# Altium PCB PC110-itx.PcbDoc (part 1 of 16)
Units mm, origin at the board's own origin, x right, y up, seen from the top; angles counter-clockwise.
Board outline 170 x 170 mm, 16 copper layers (FC1, FC2, FC3, FC4, IP1, IC1, IC2, IP2, IP3, IC3, IC4, IP4, BC4, BC3, BC2, BC1), stack 3.903 mm thick; 935 components, 1357 nets, 4698 pads, 3240 vias.
Unrouted connection lines stored in the file: 552.
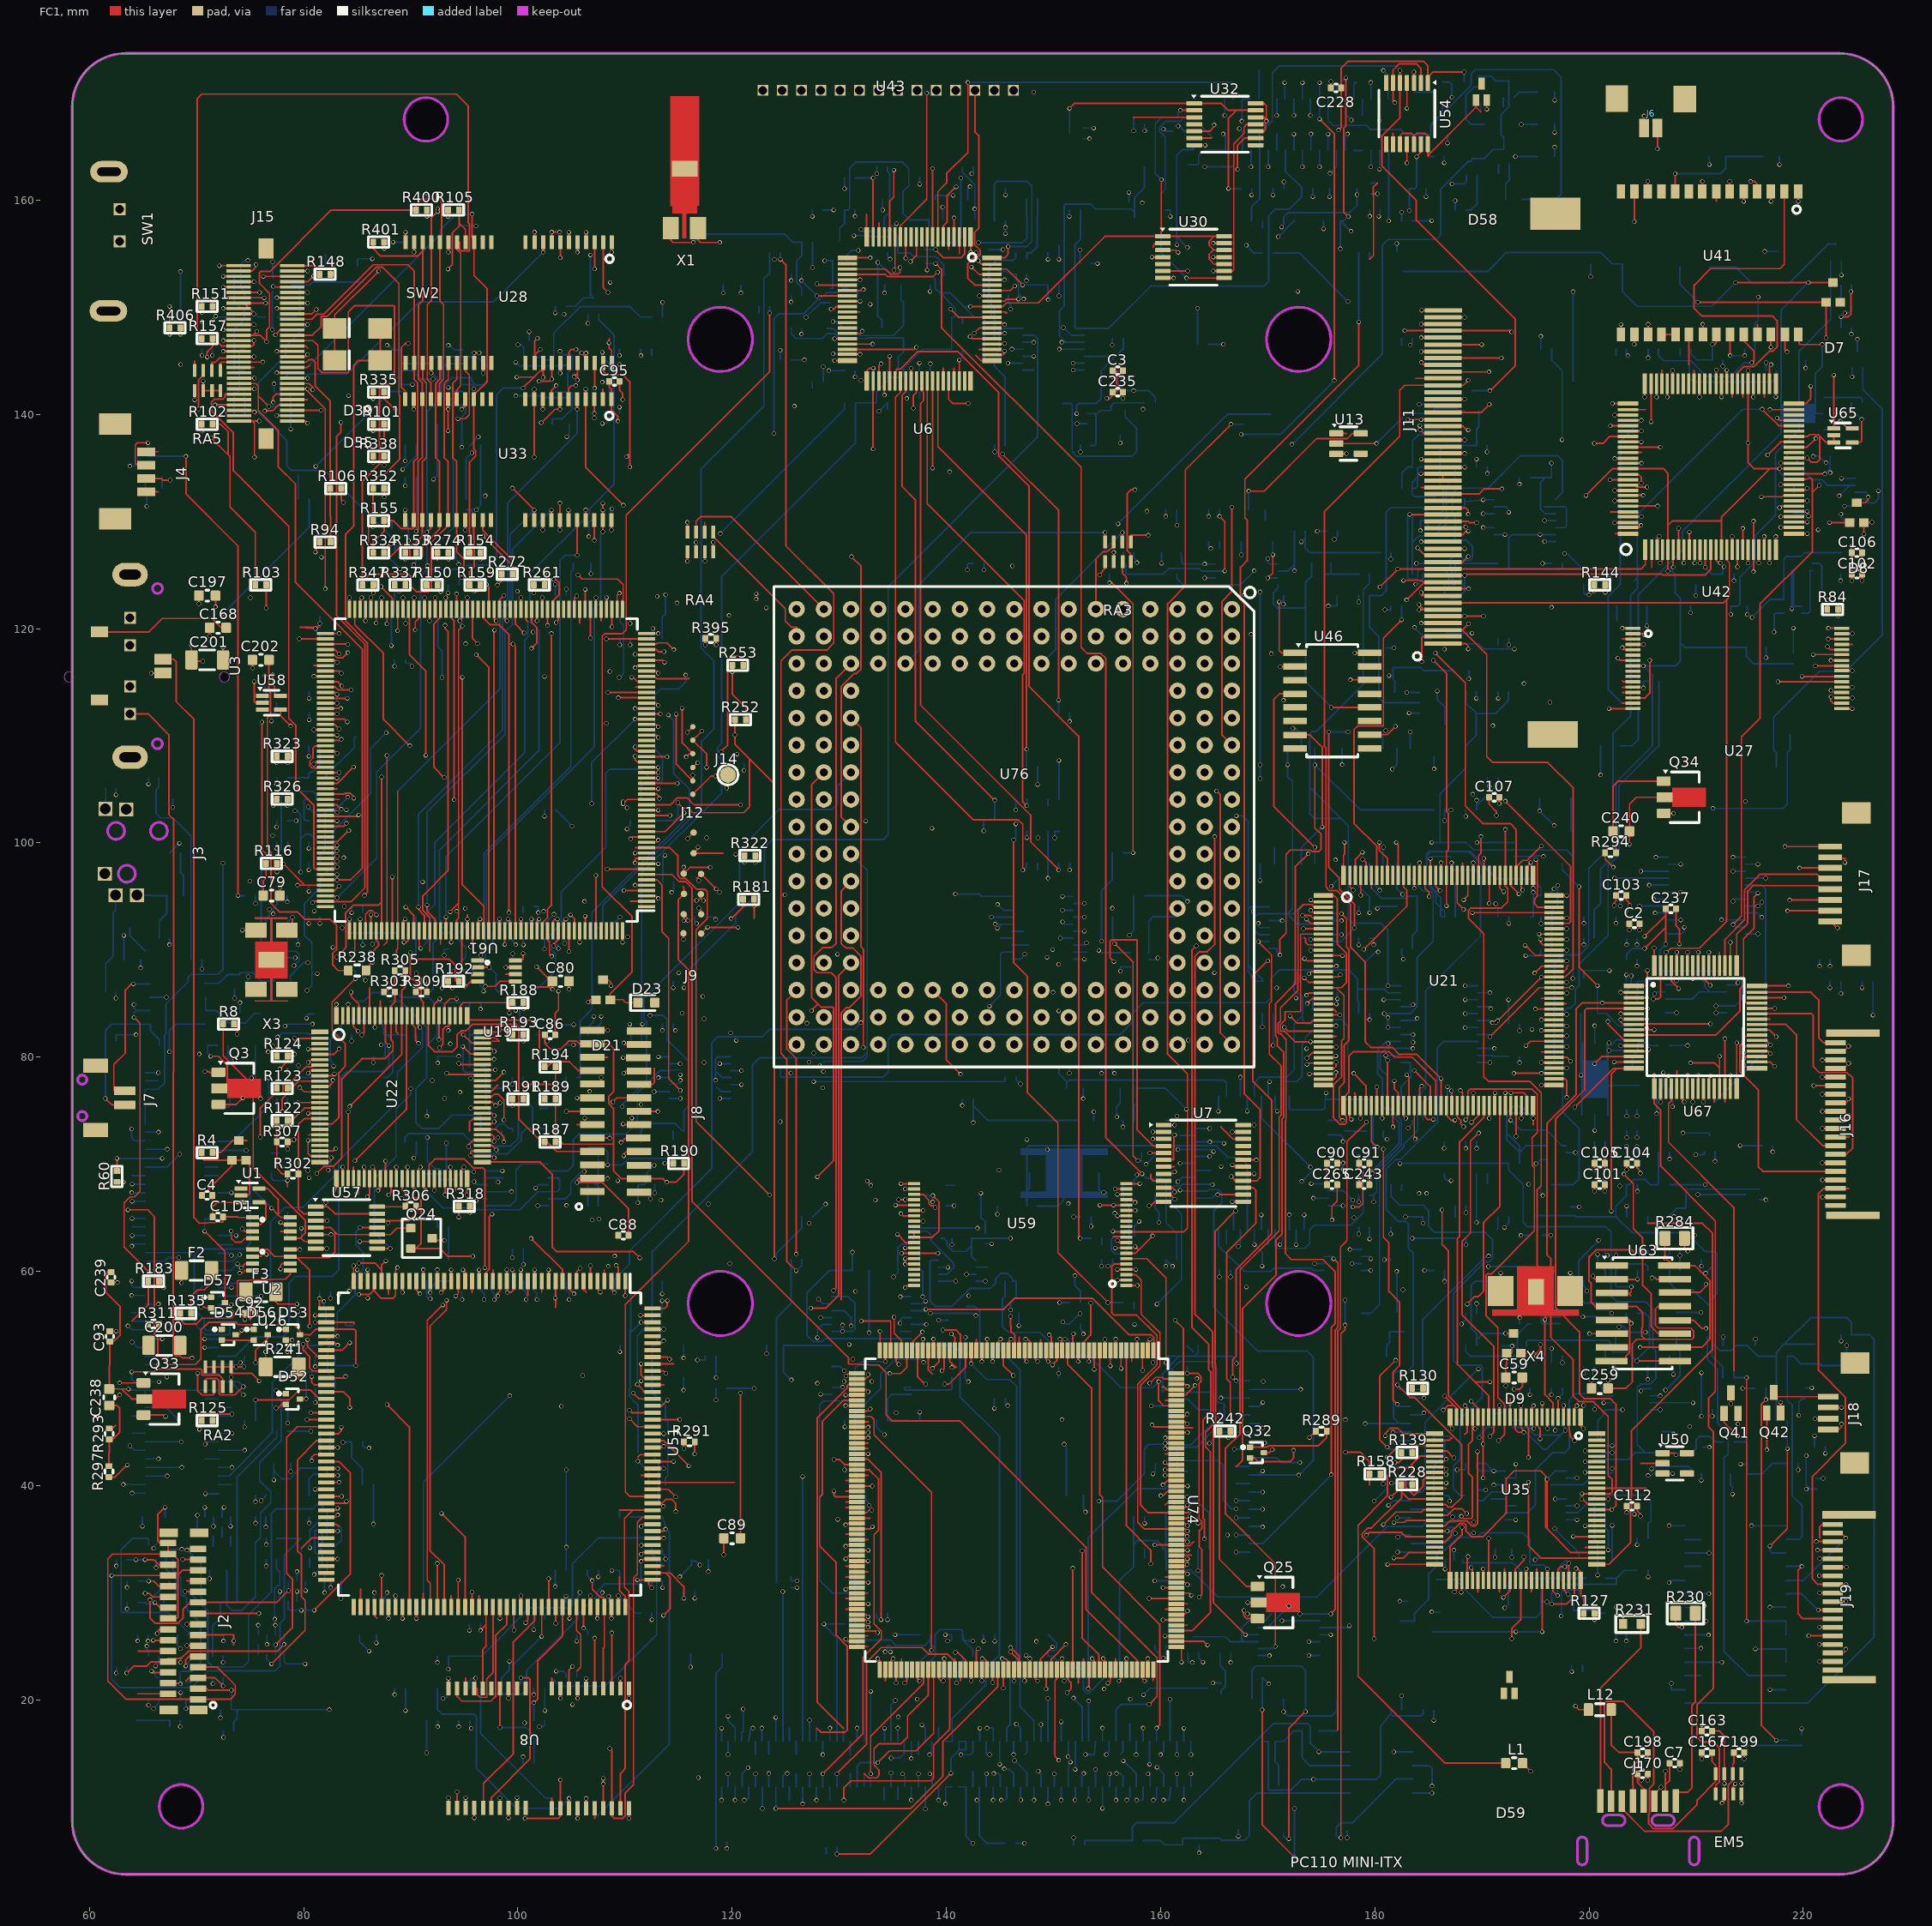
[diagram p0: FC1 view]
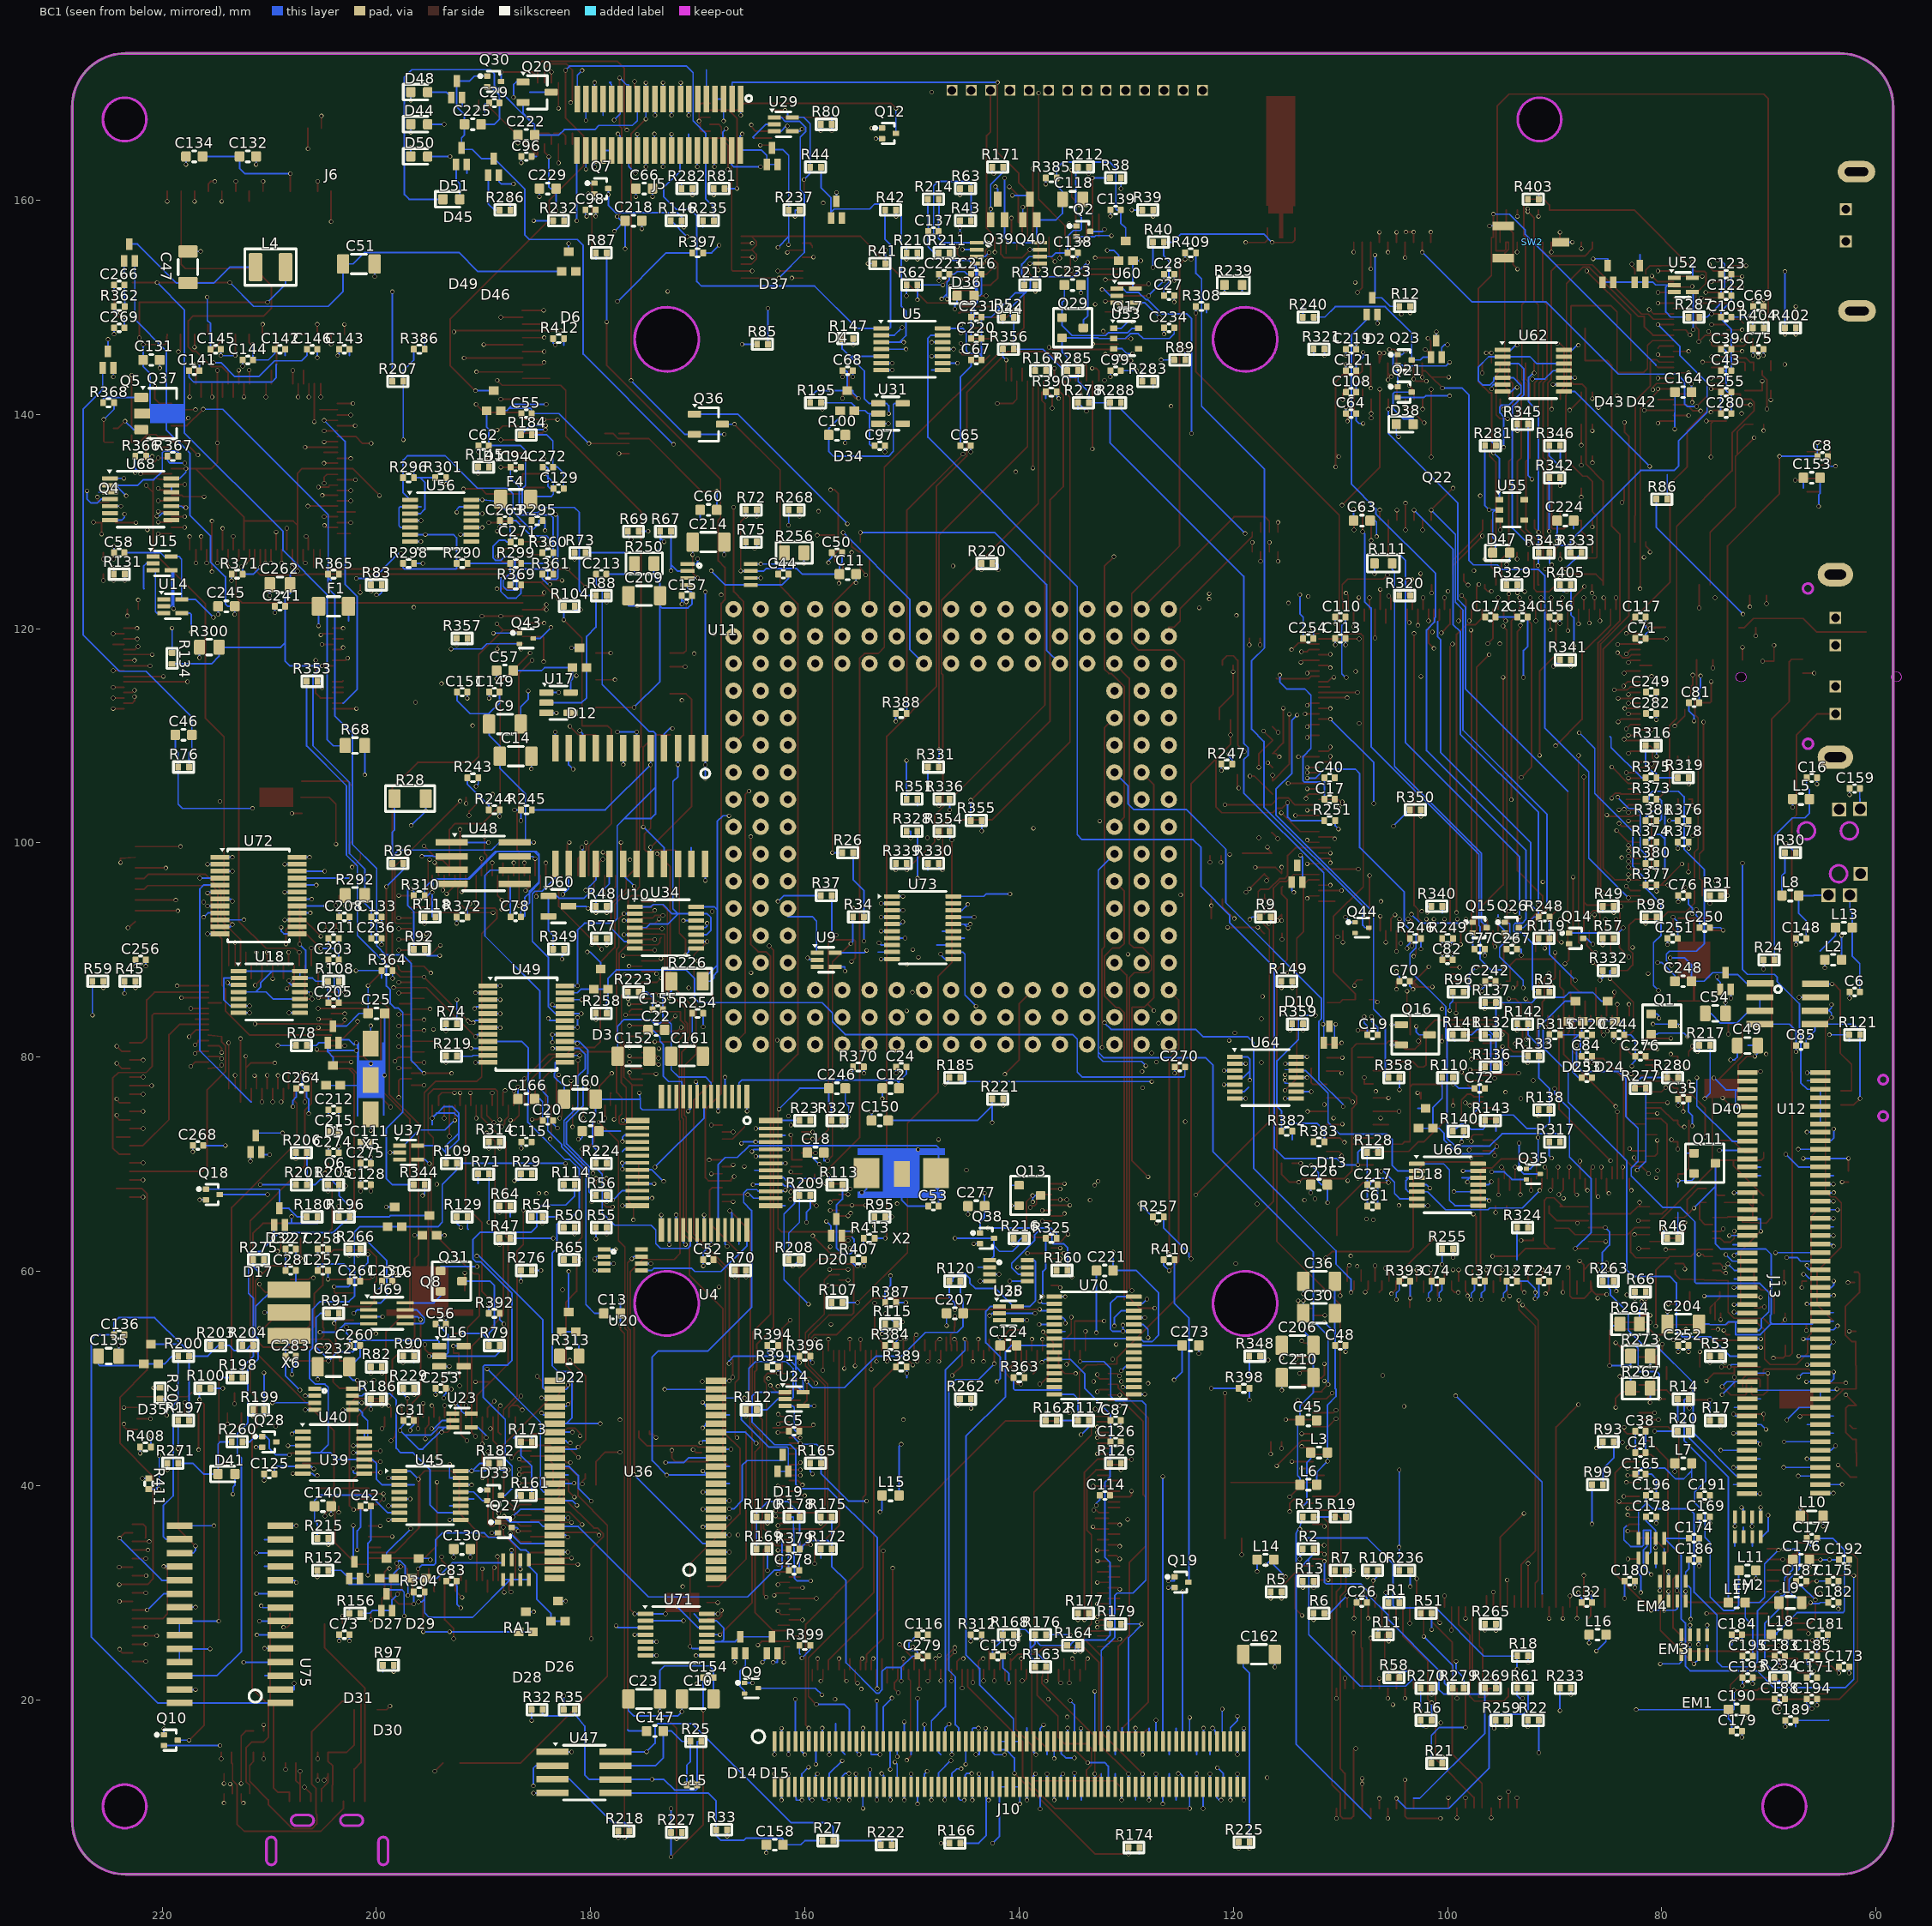
[diagram p1: BC1 view, seen from below]
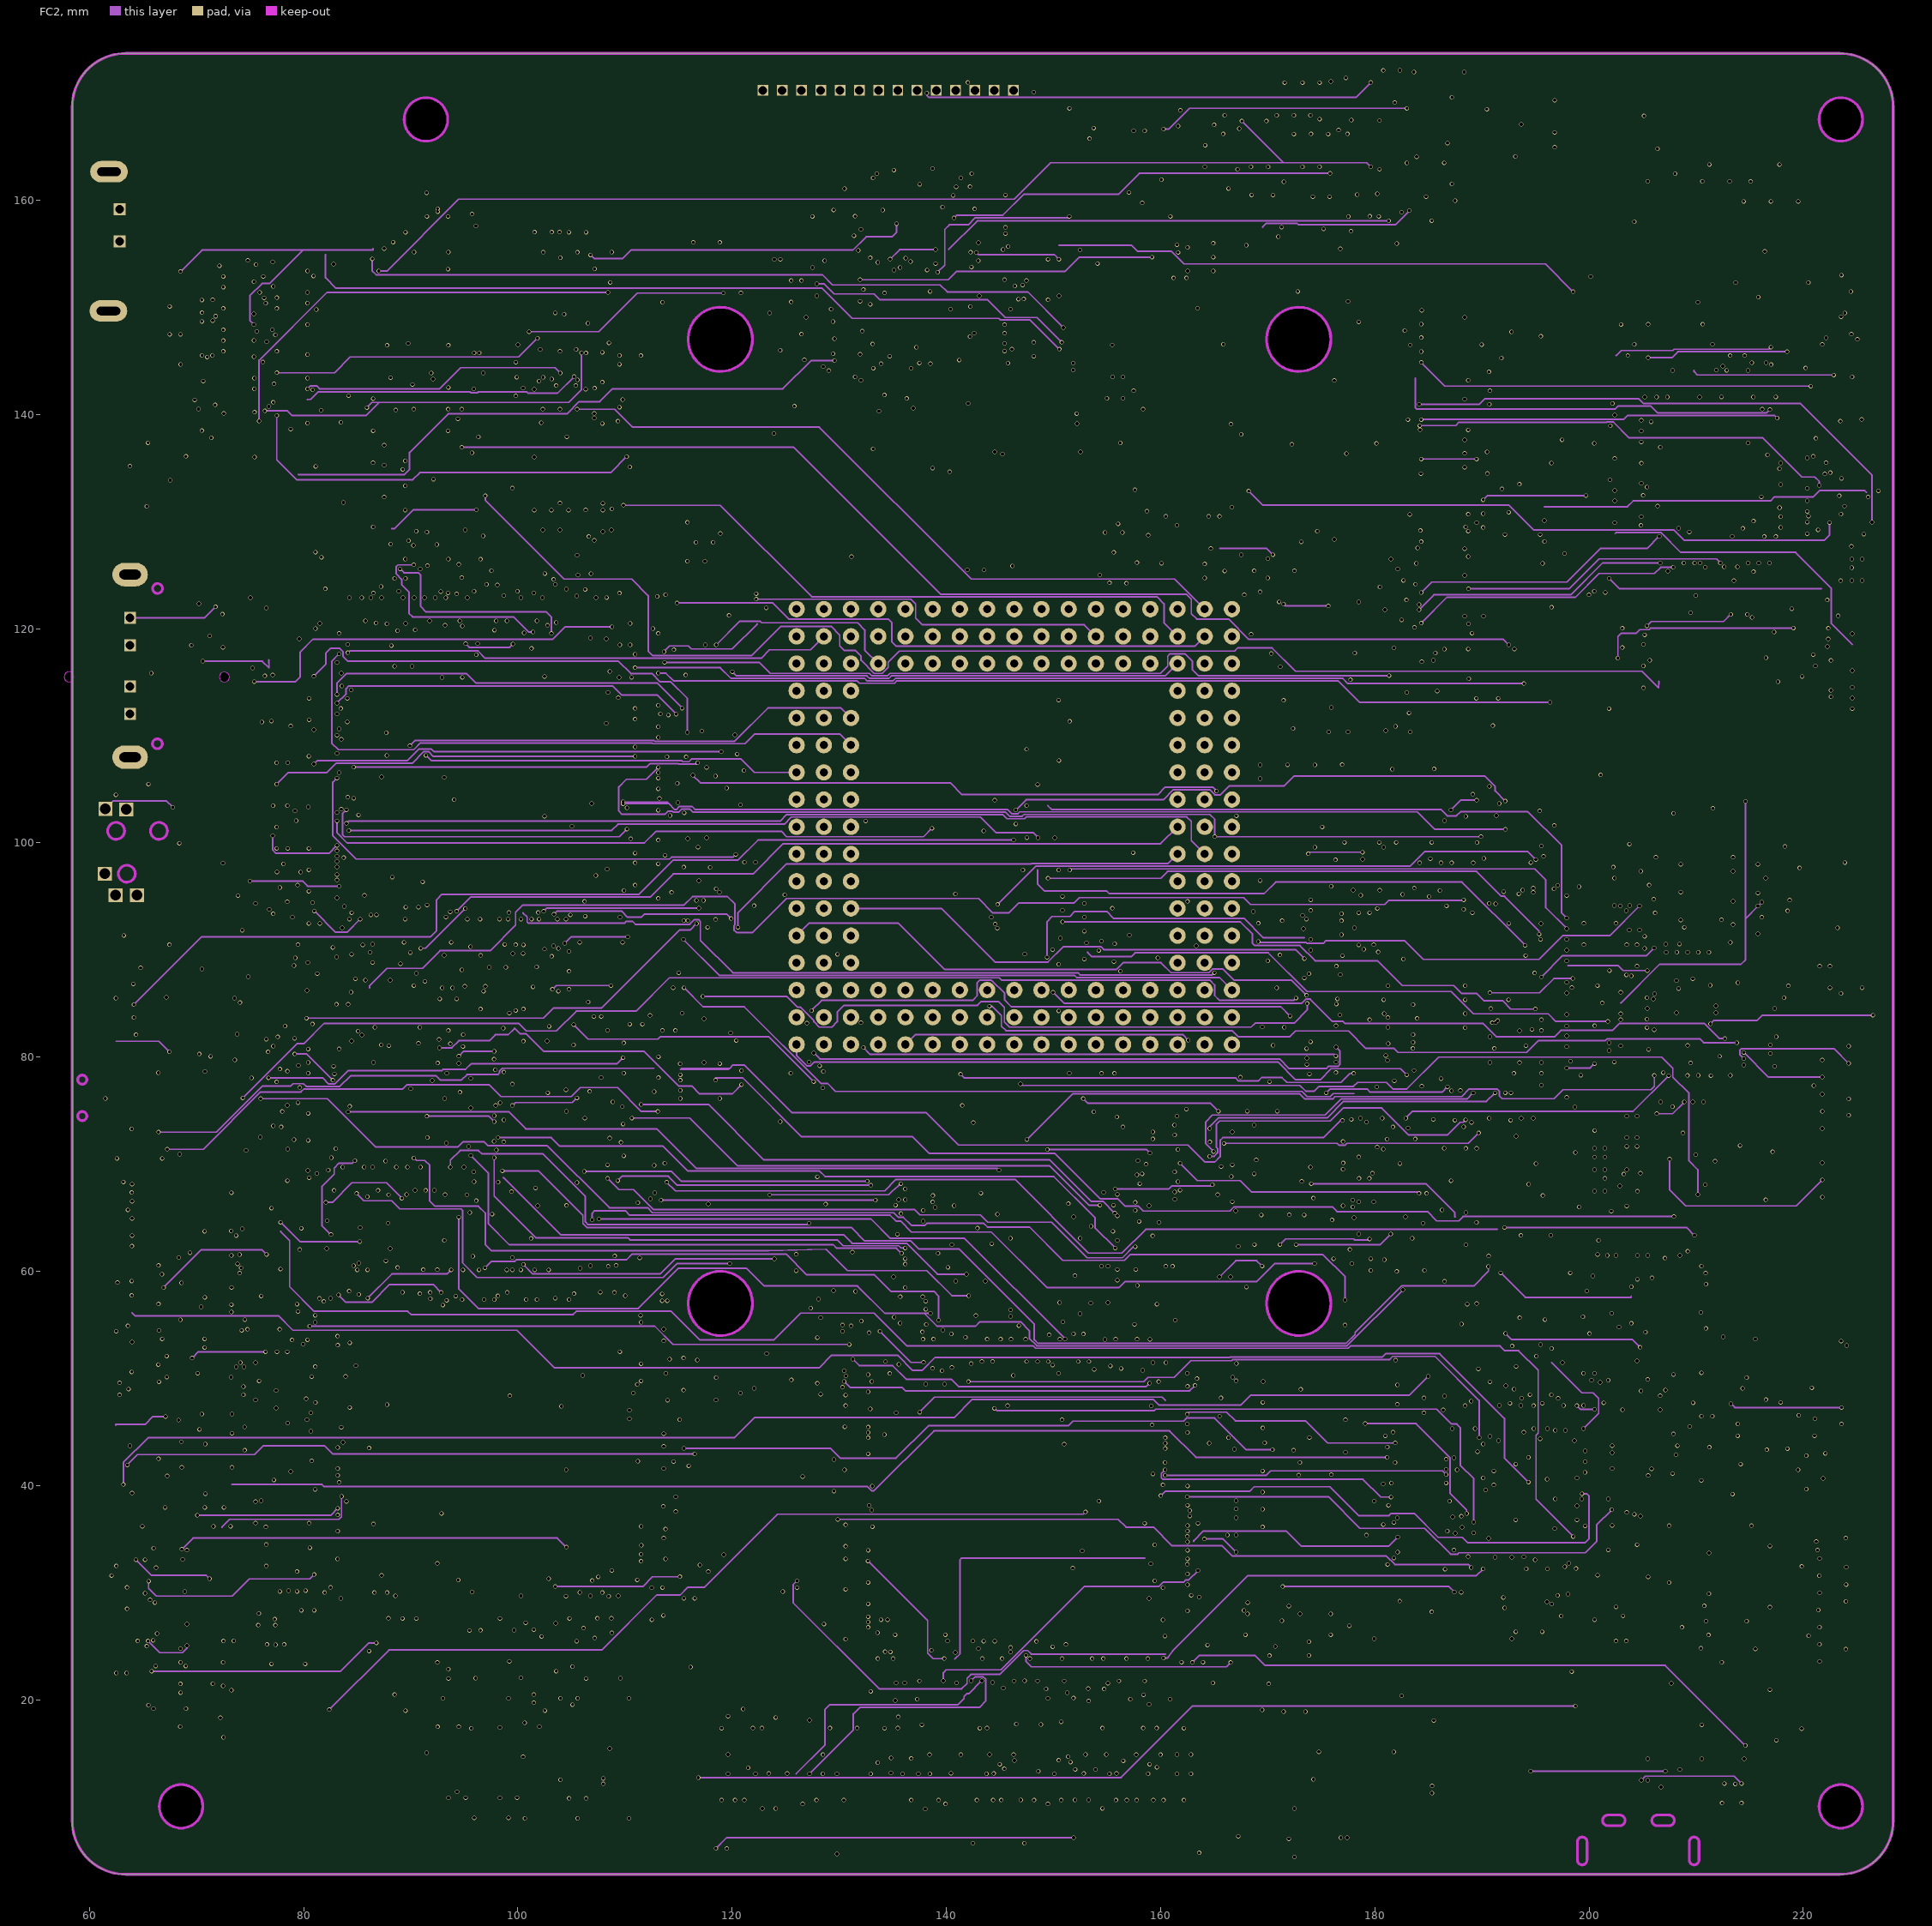
[diagram p2: FC2]
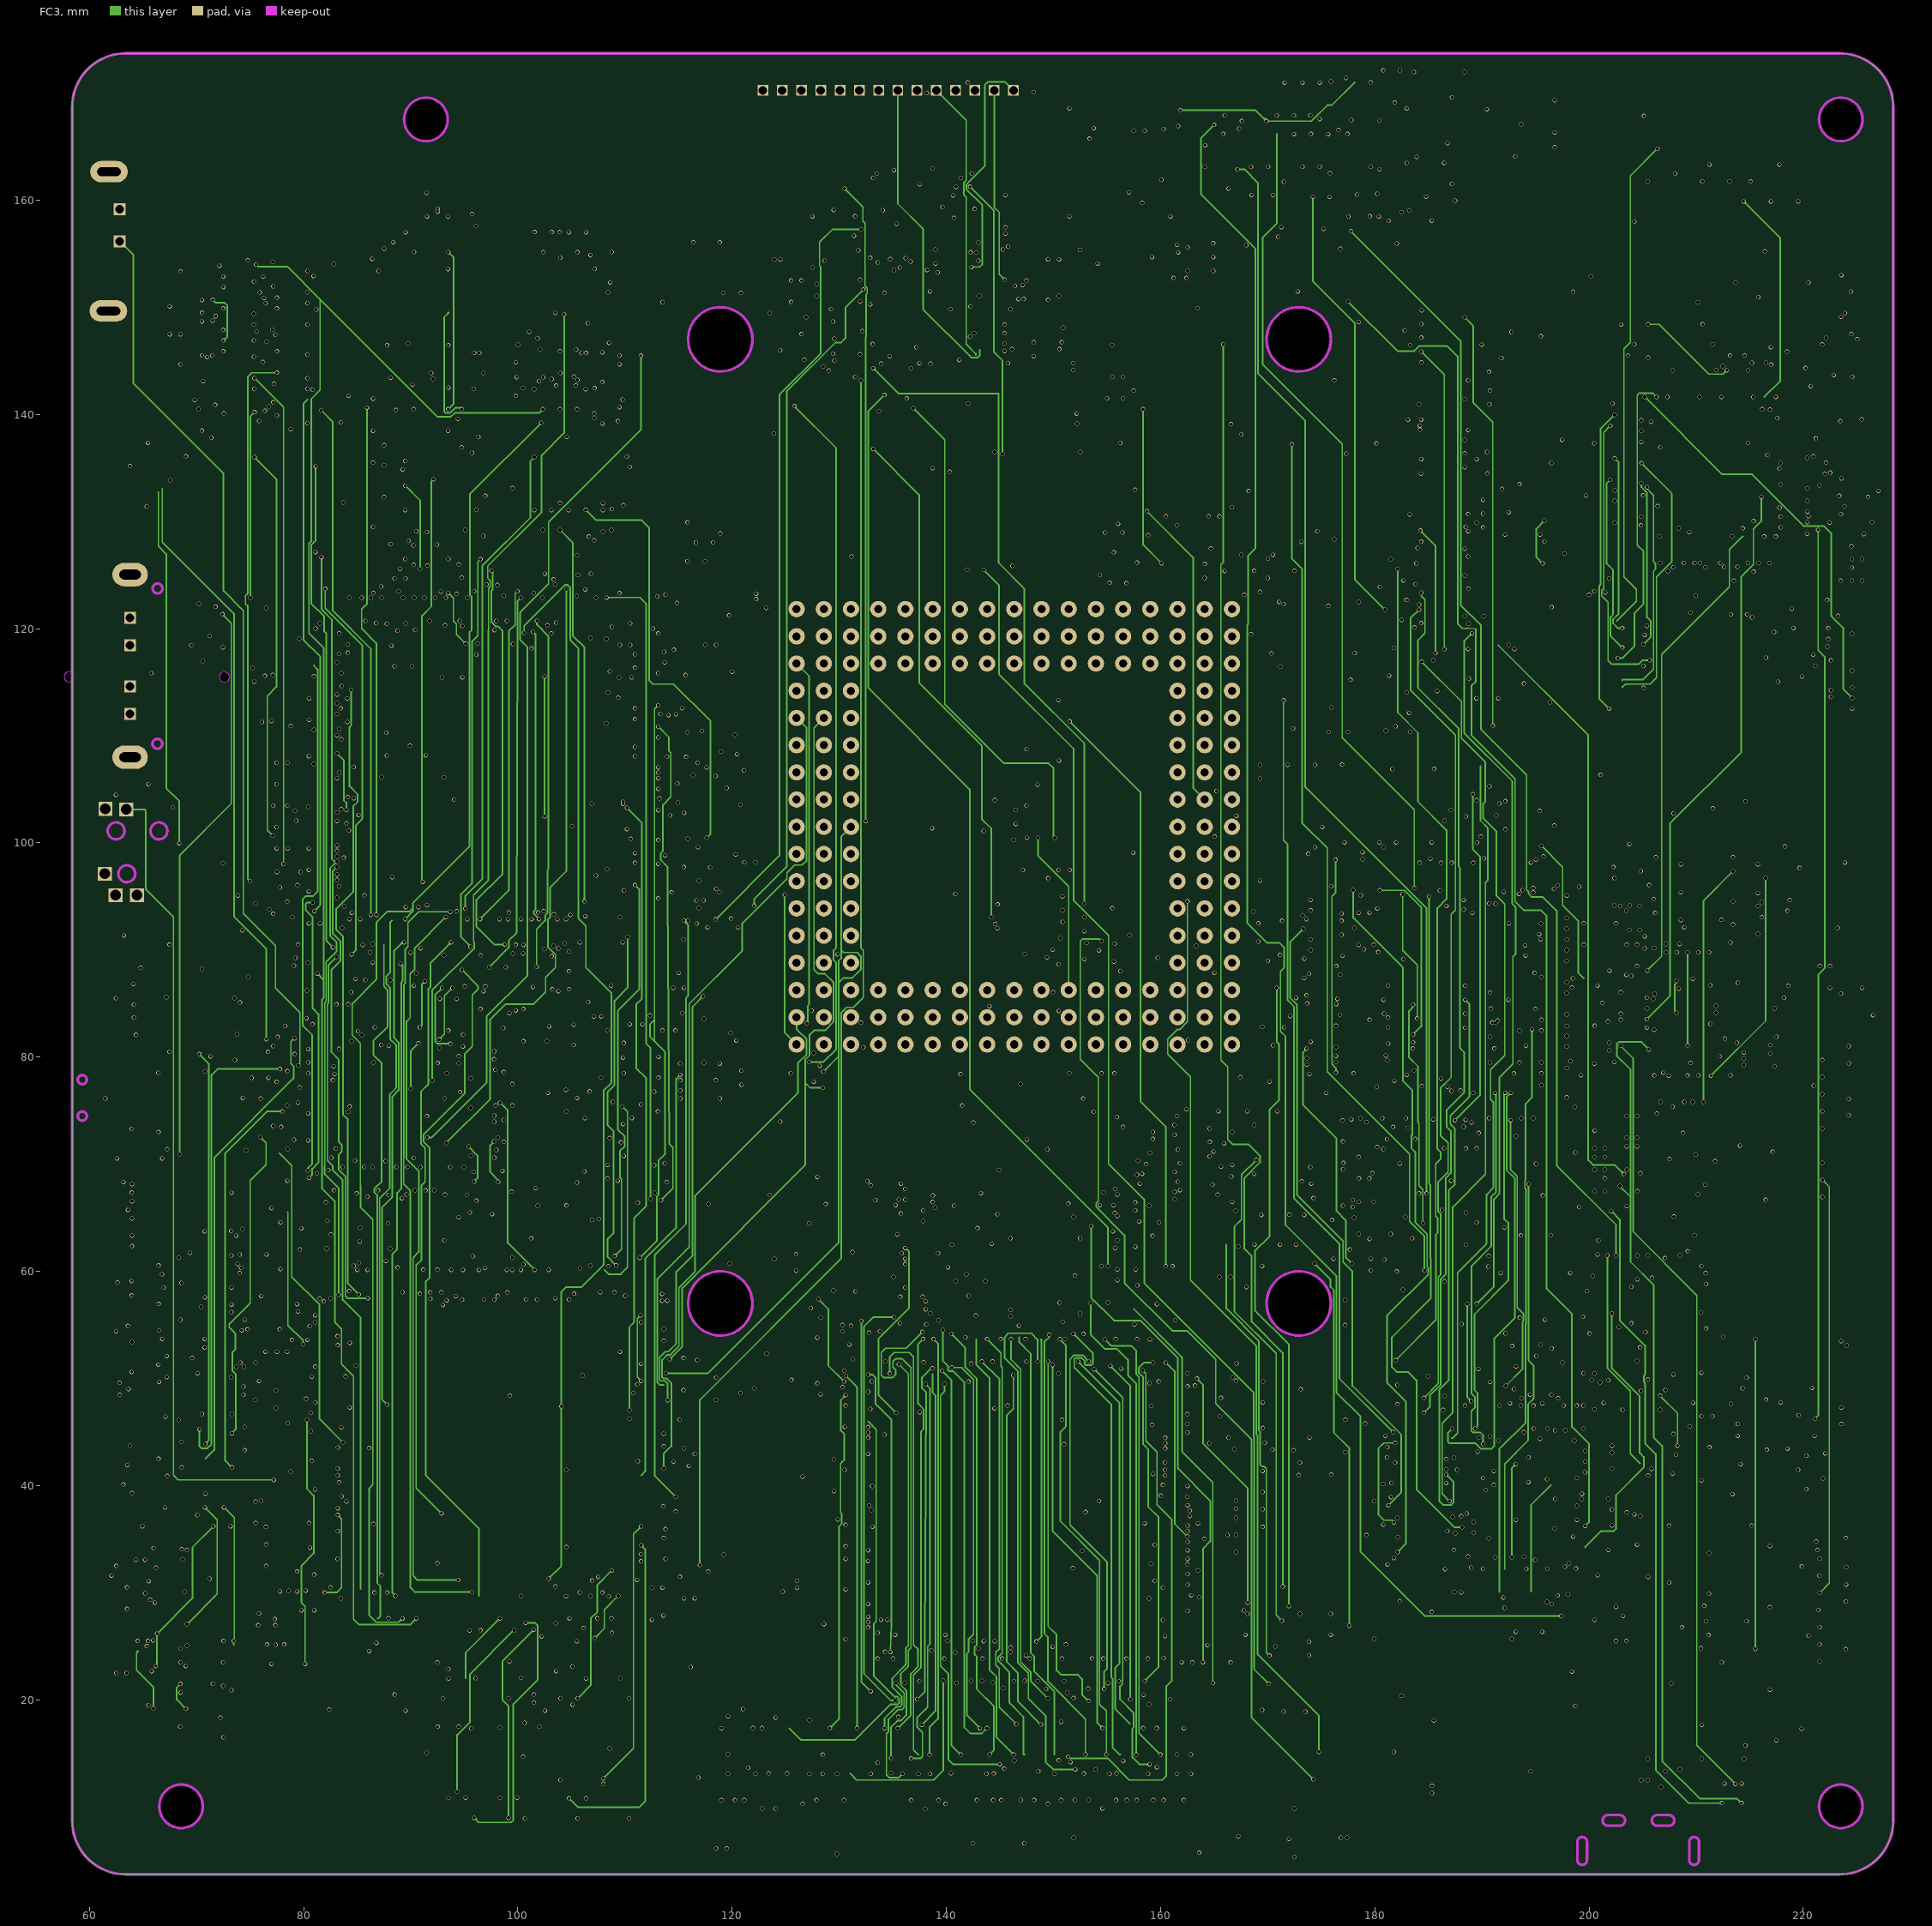
[diagram p3: FC3]
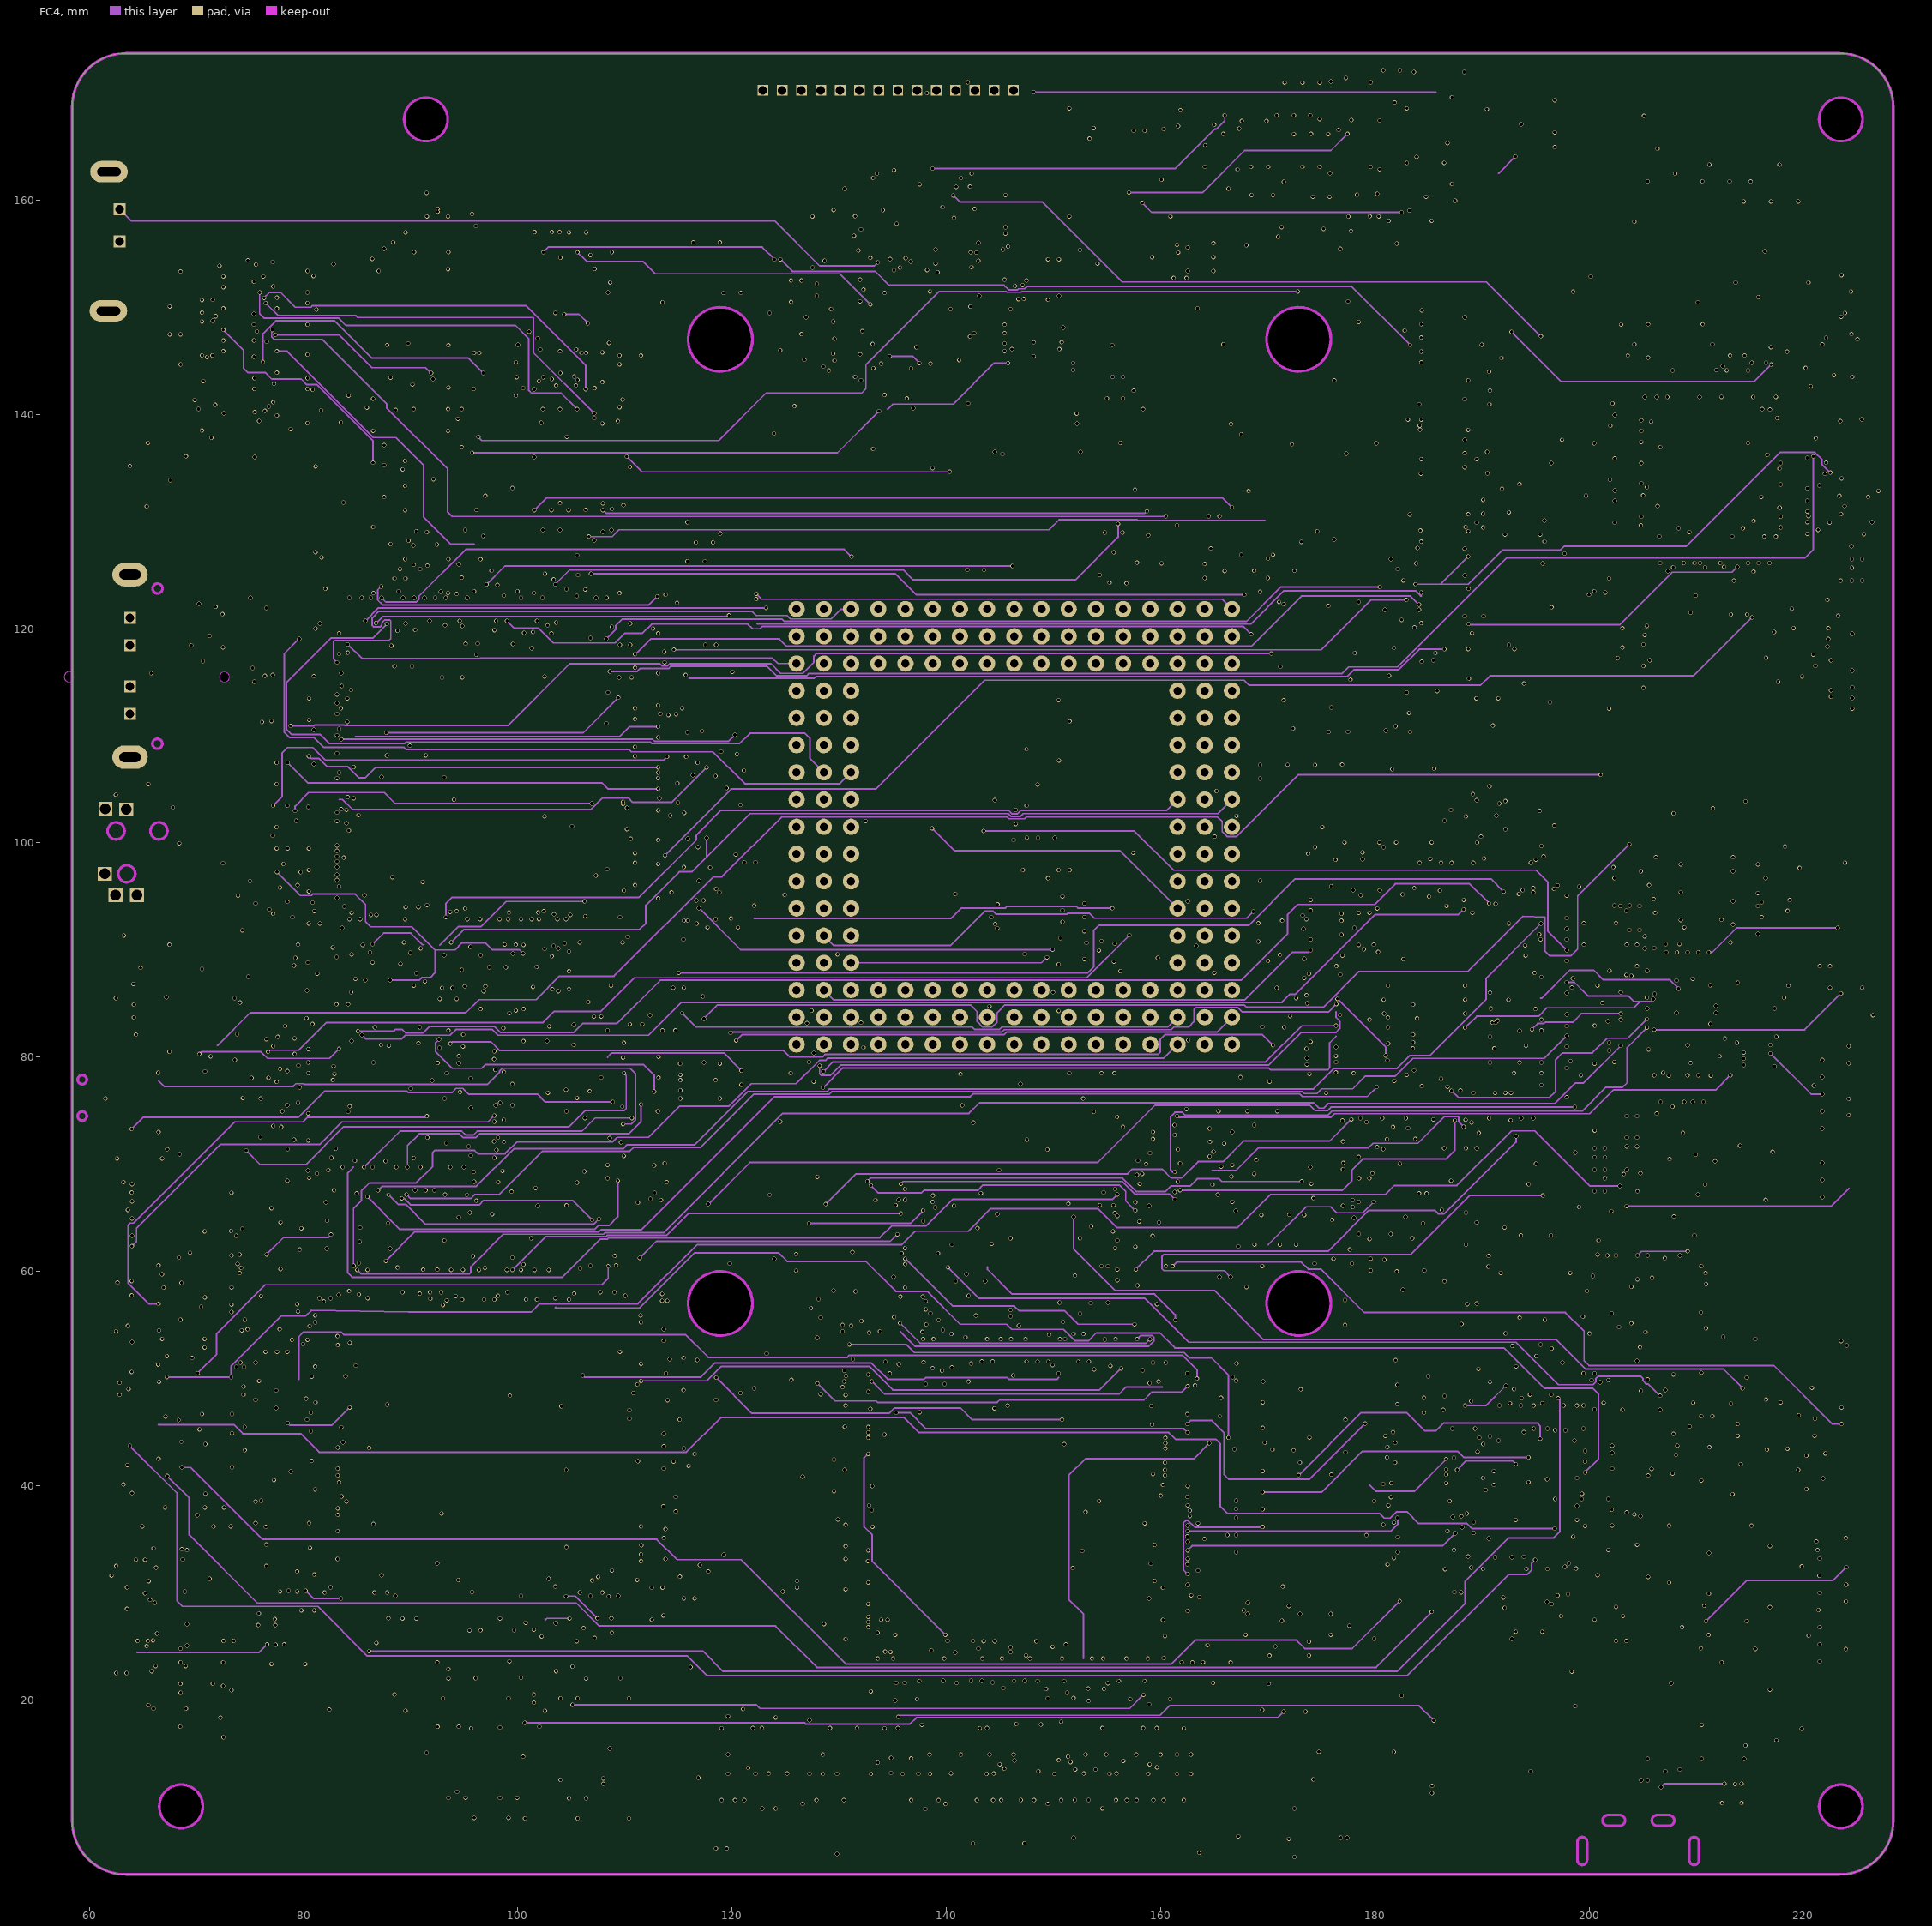
[diagram p4: FC4]
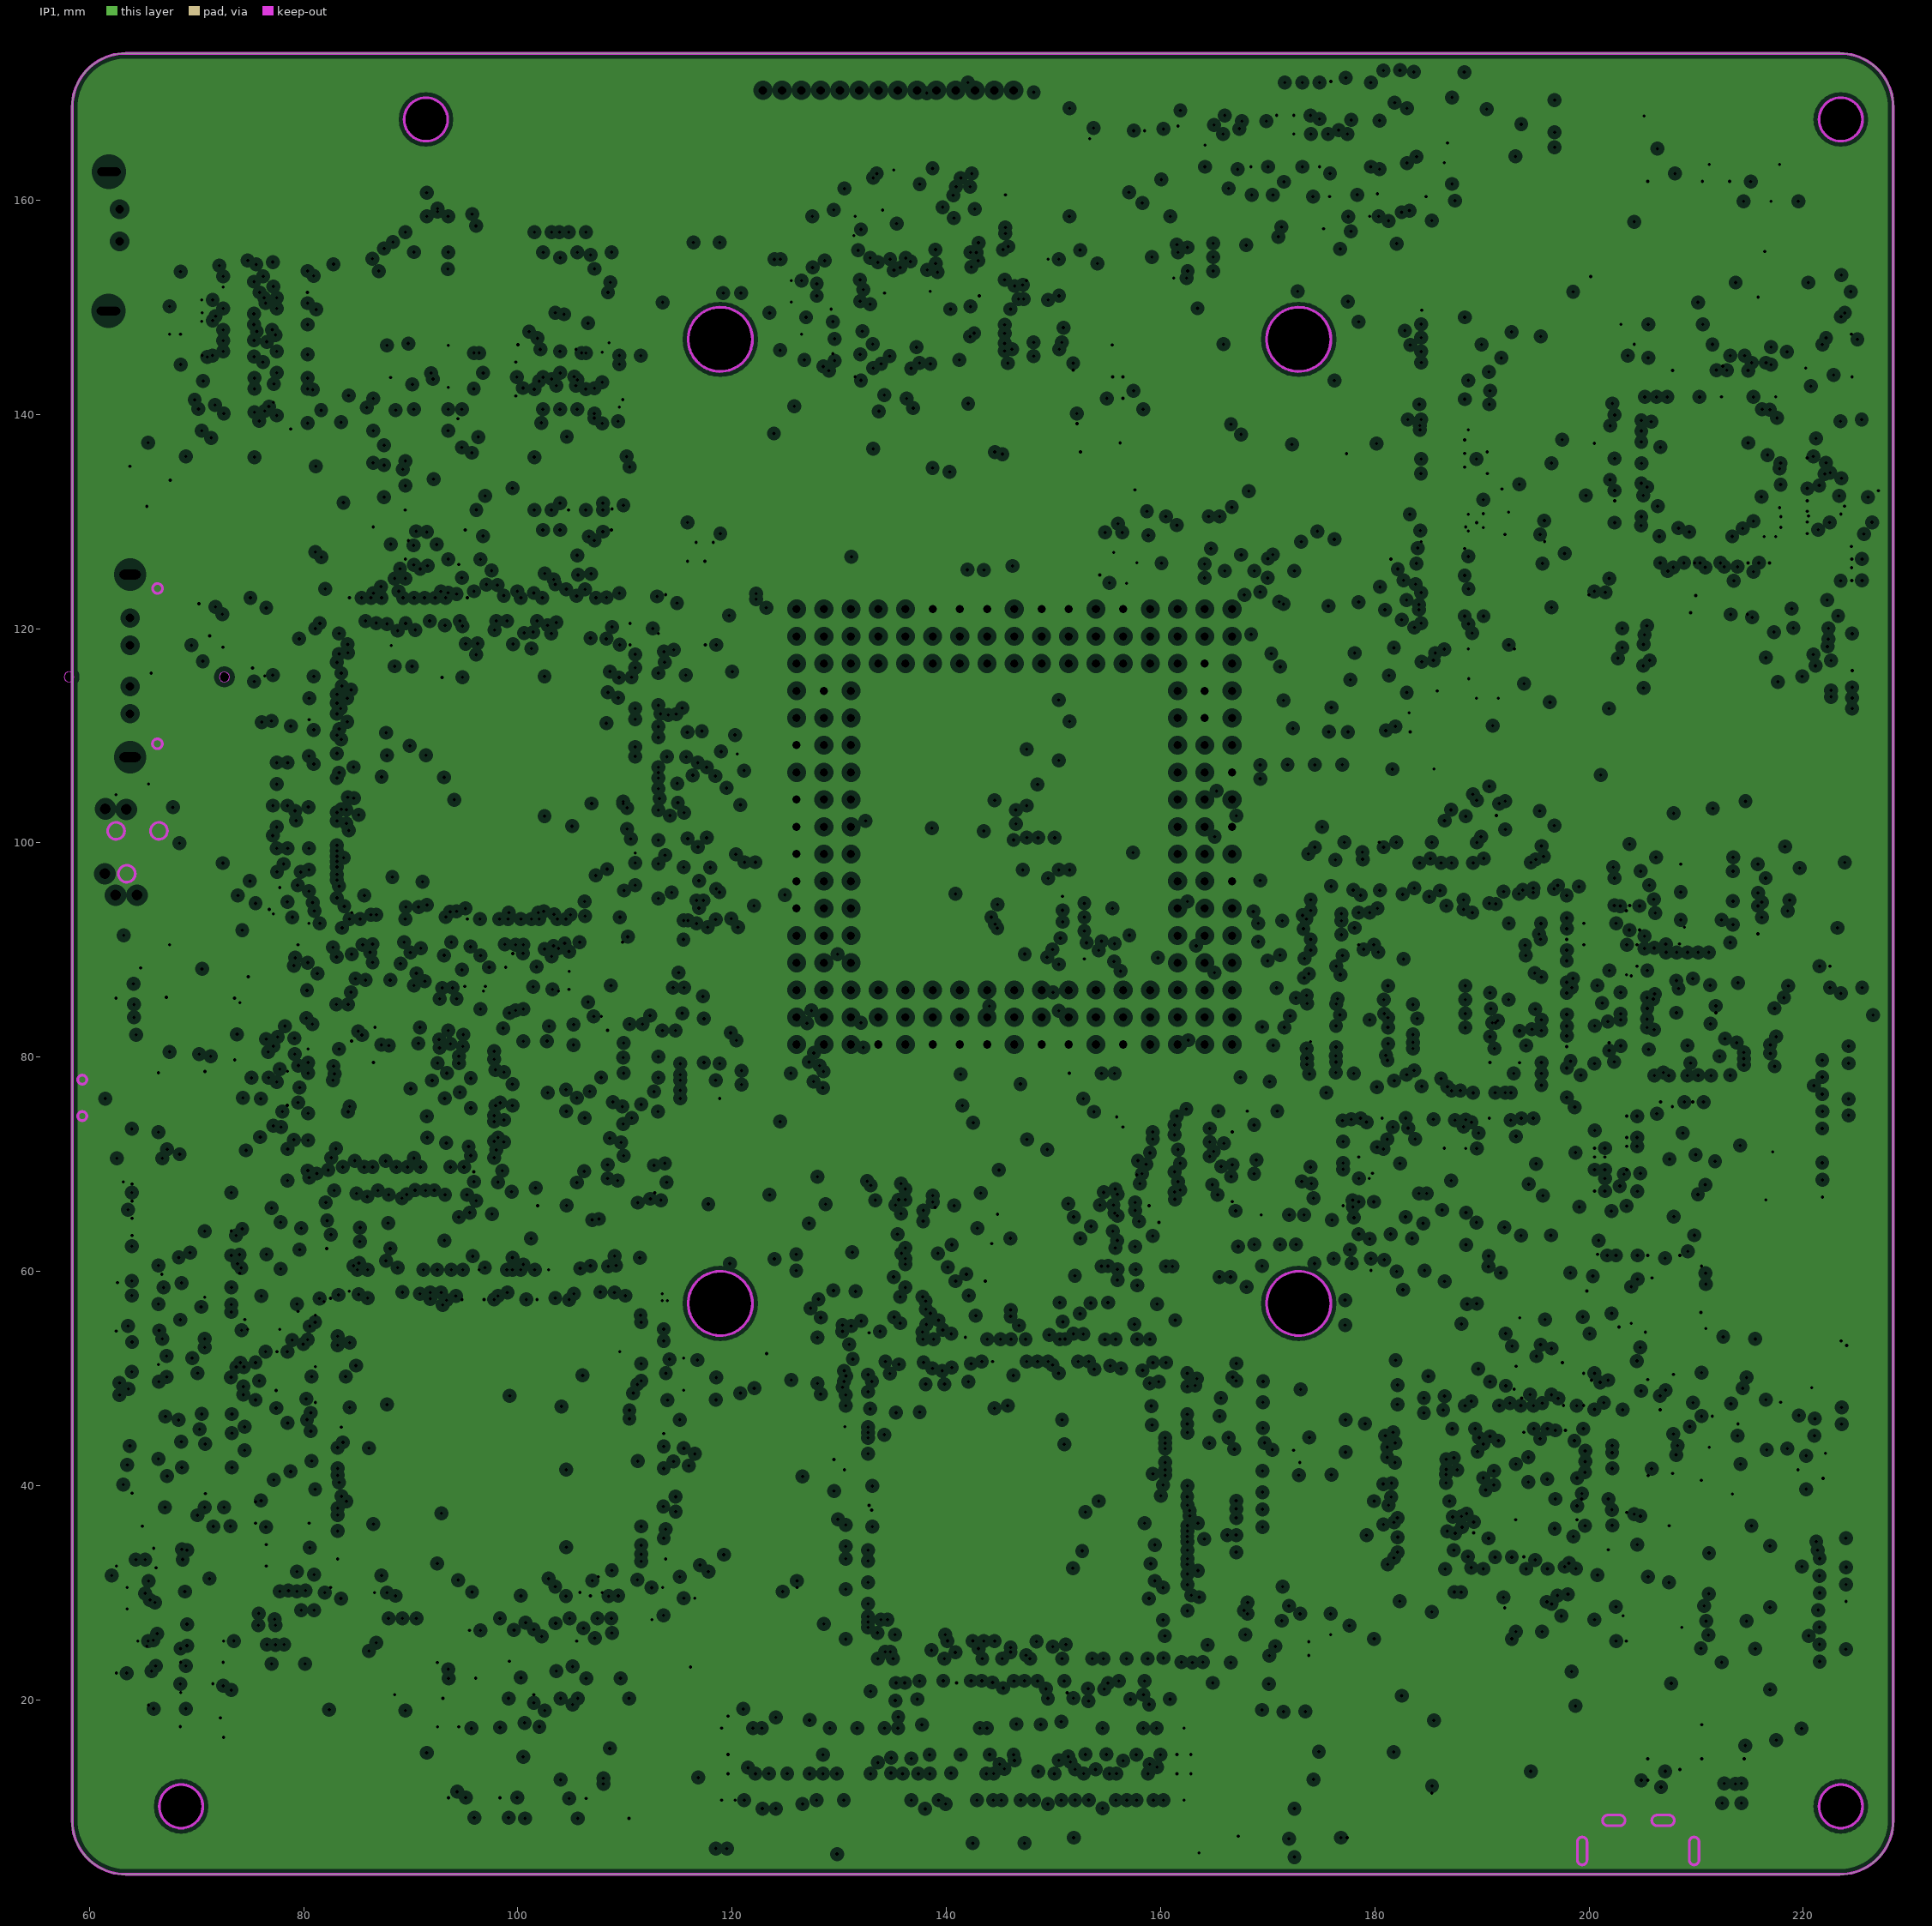
[diagram p5: IP1, clearances drawn from the general rule]
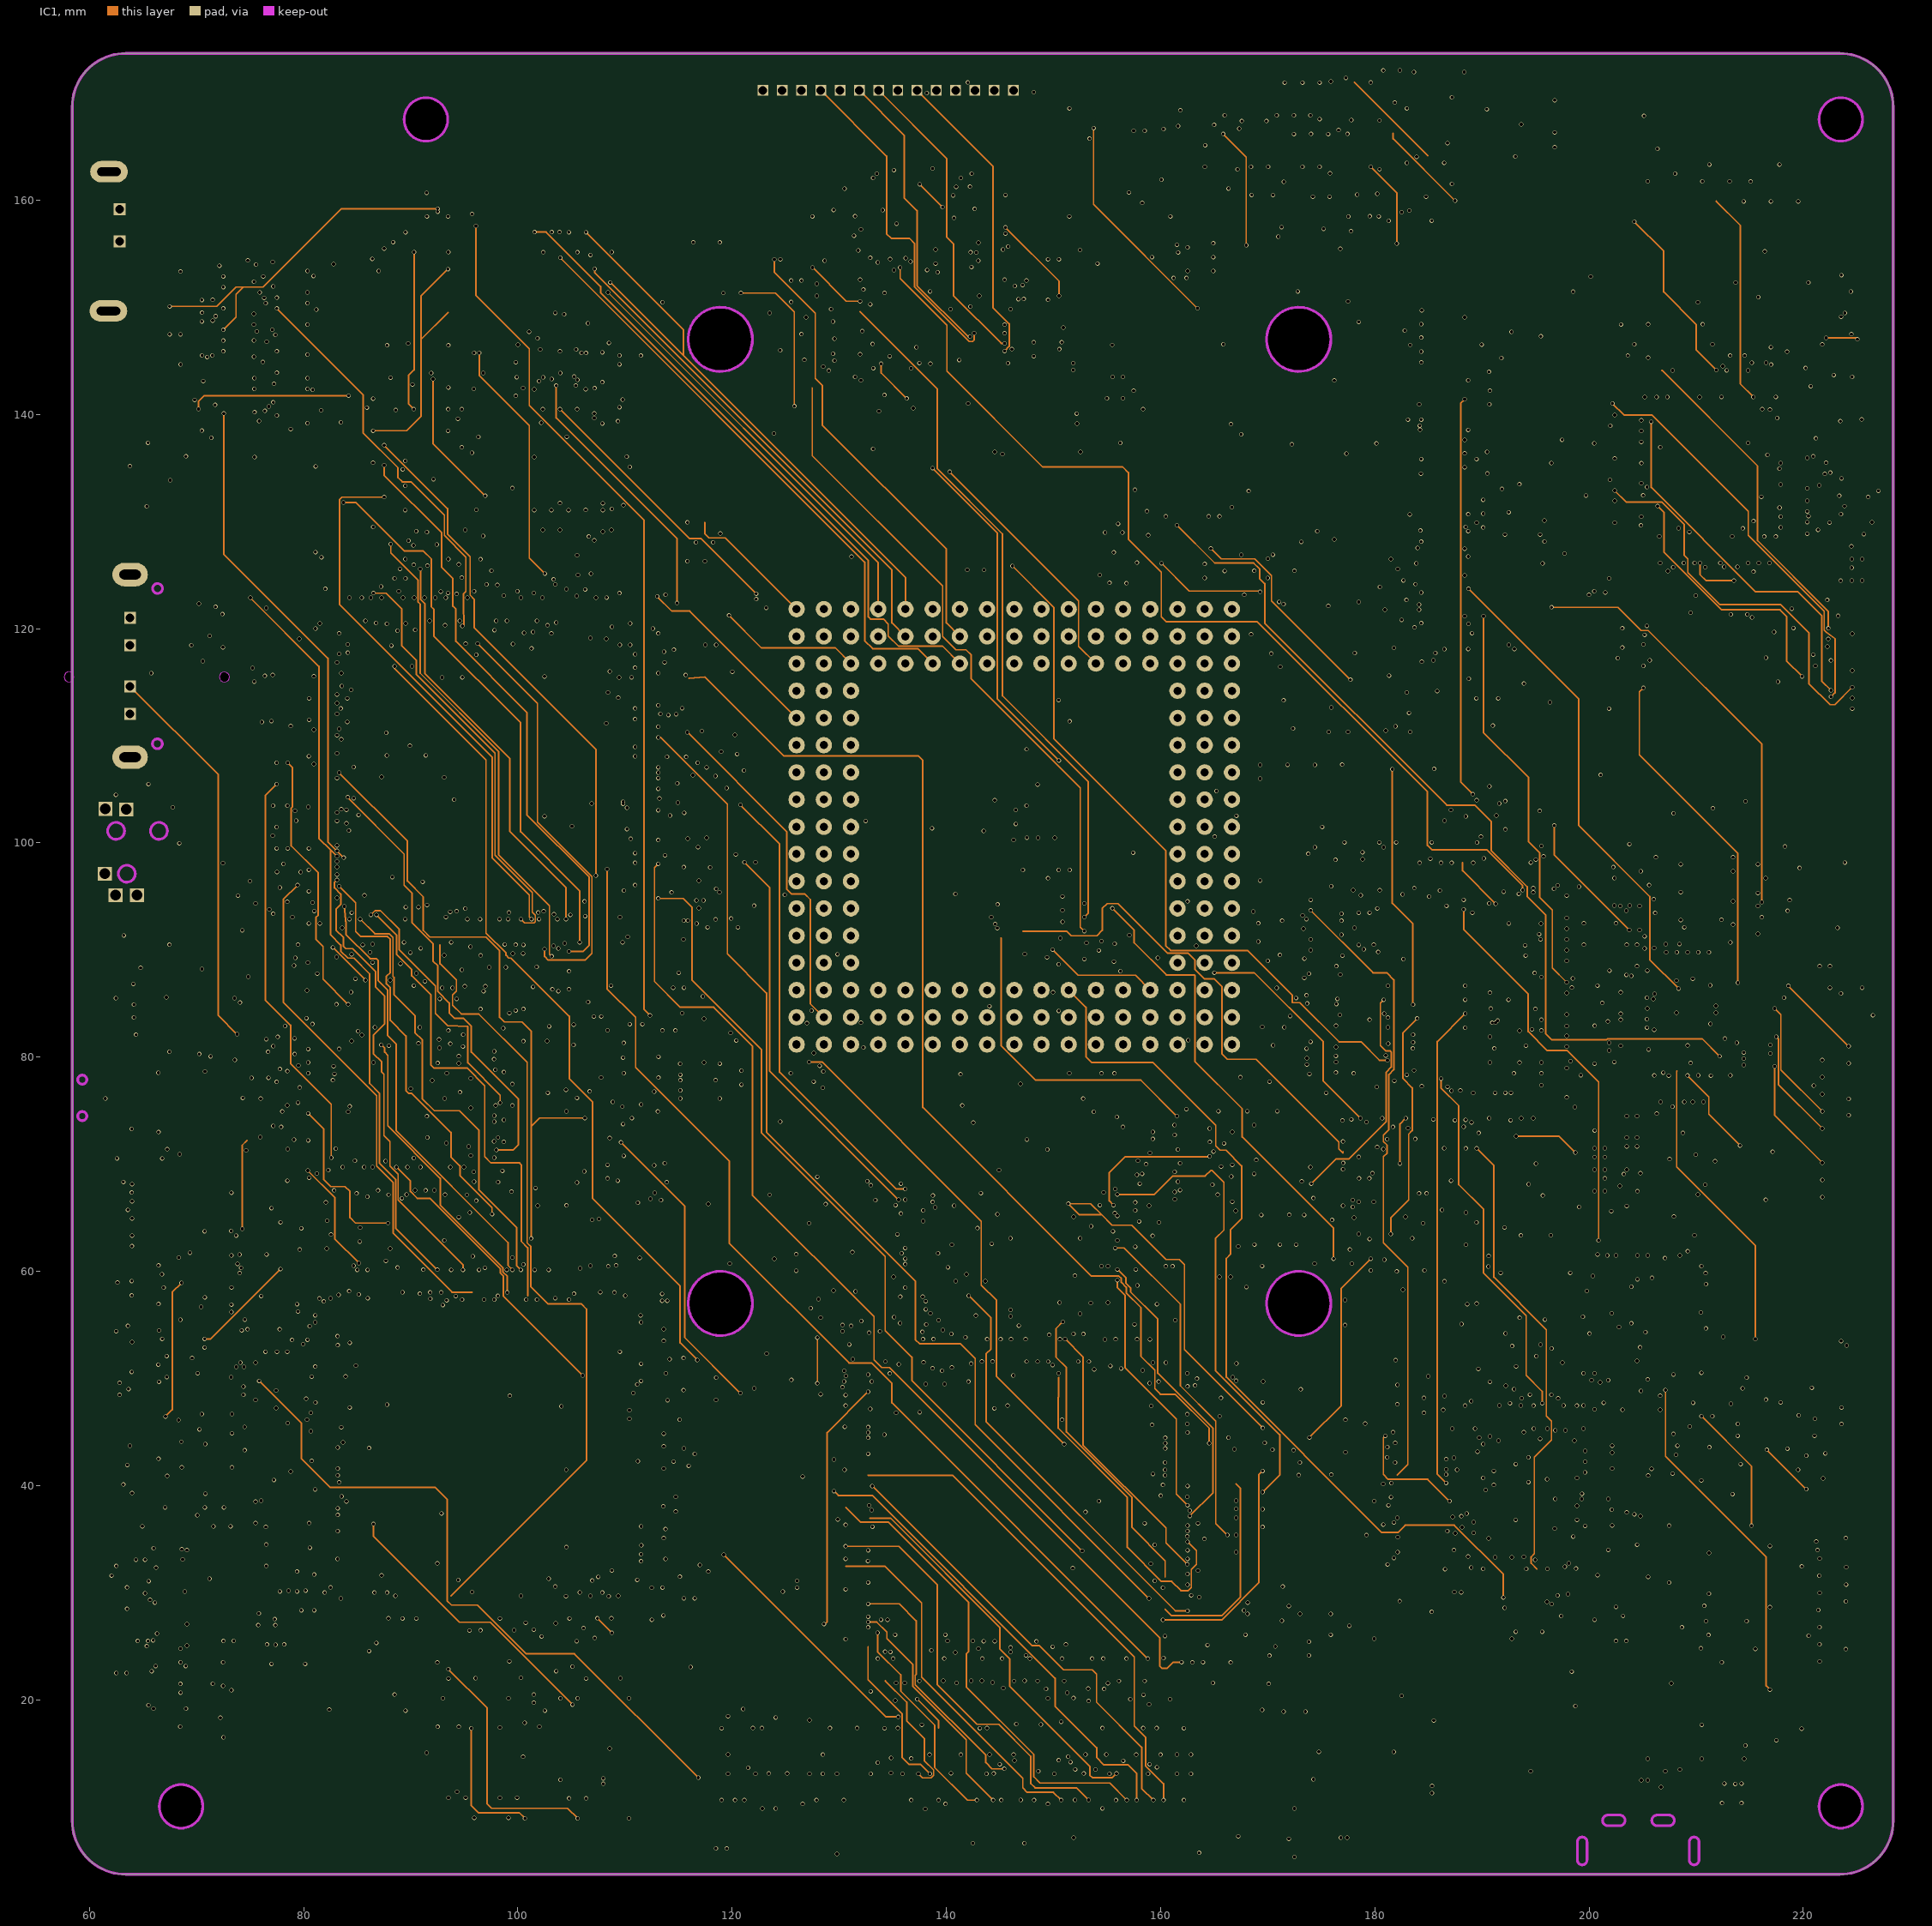
[diagram p6: IC1]
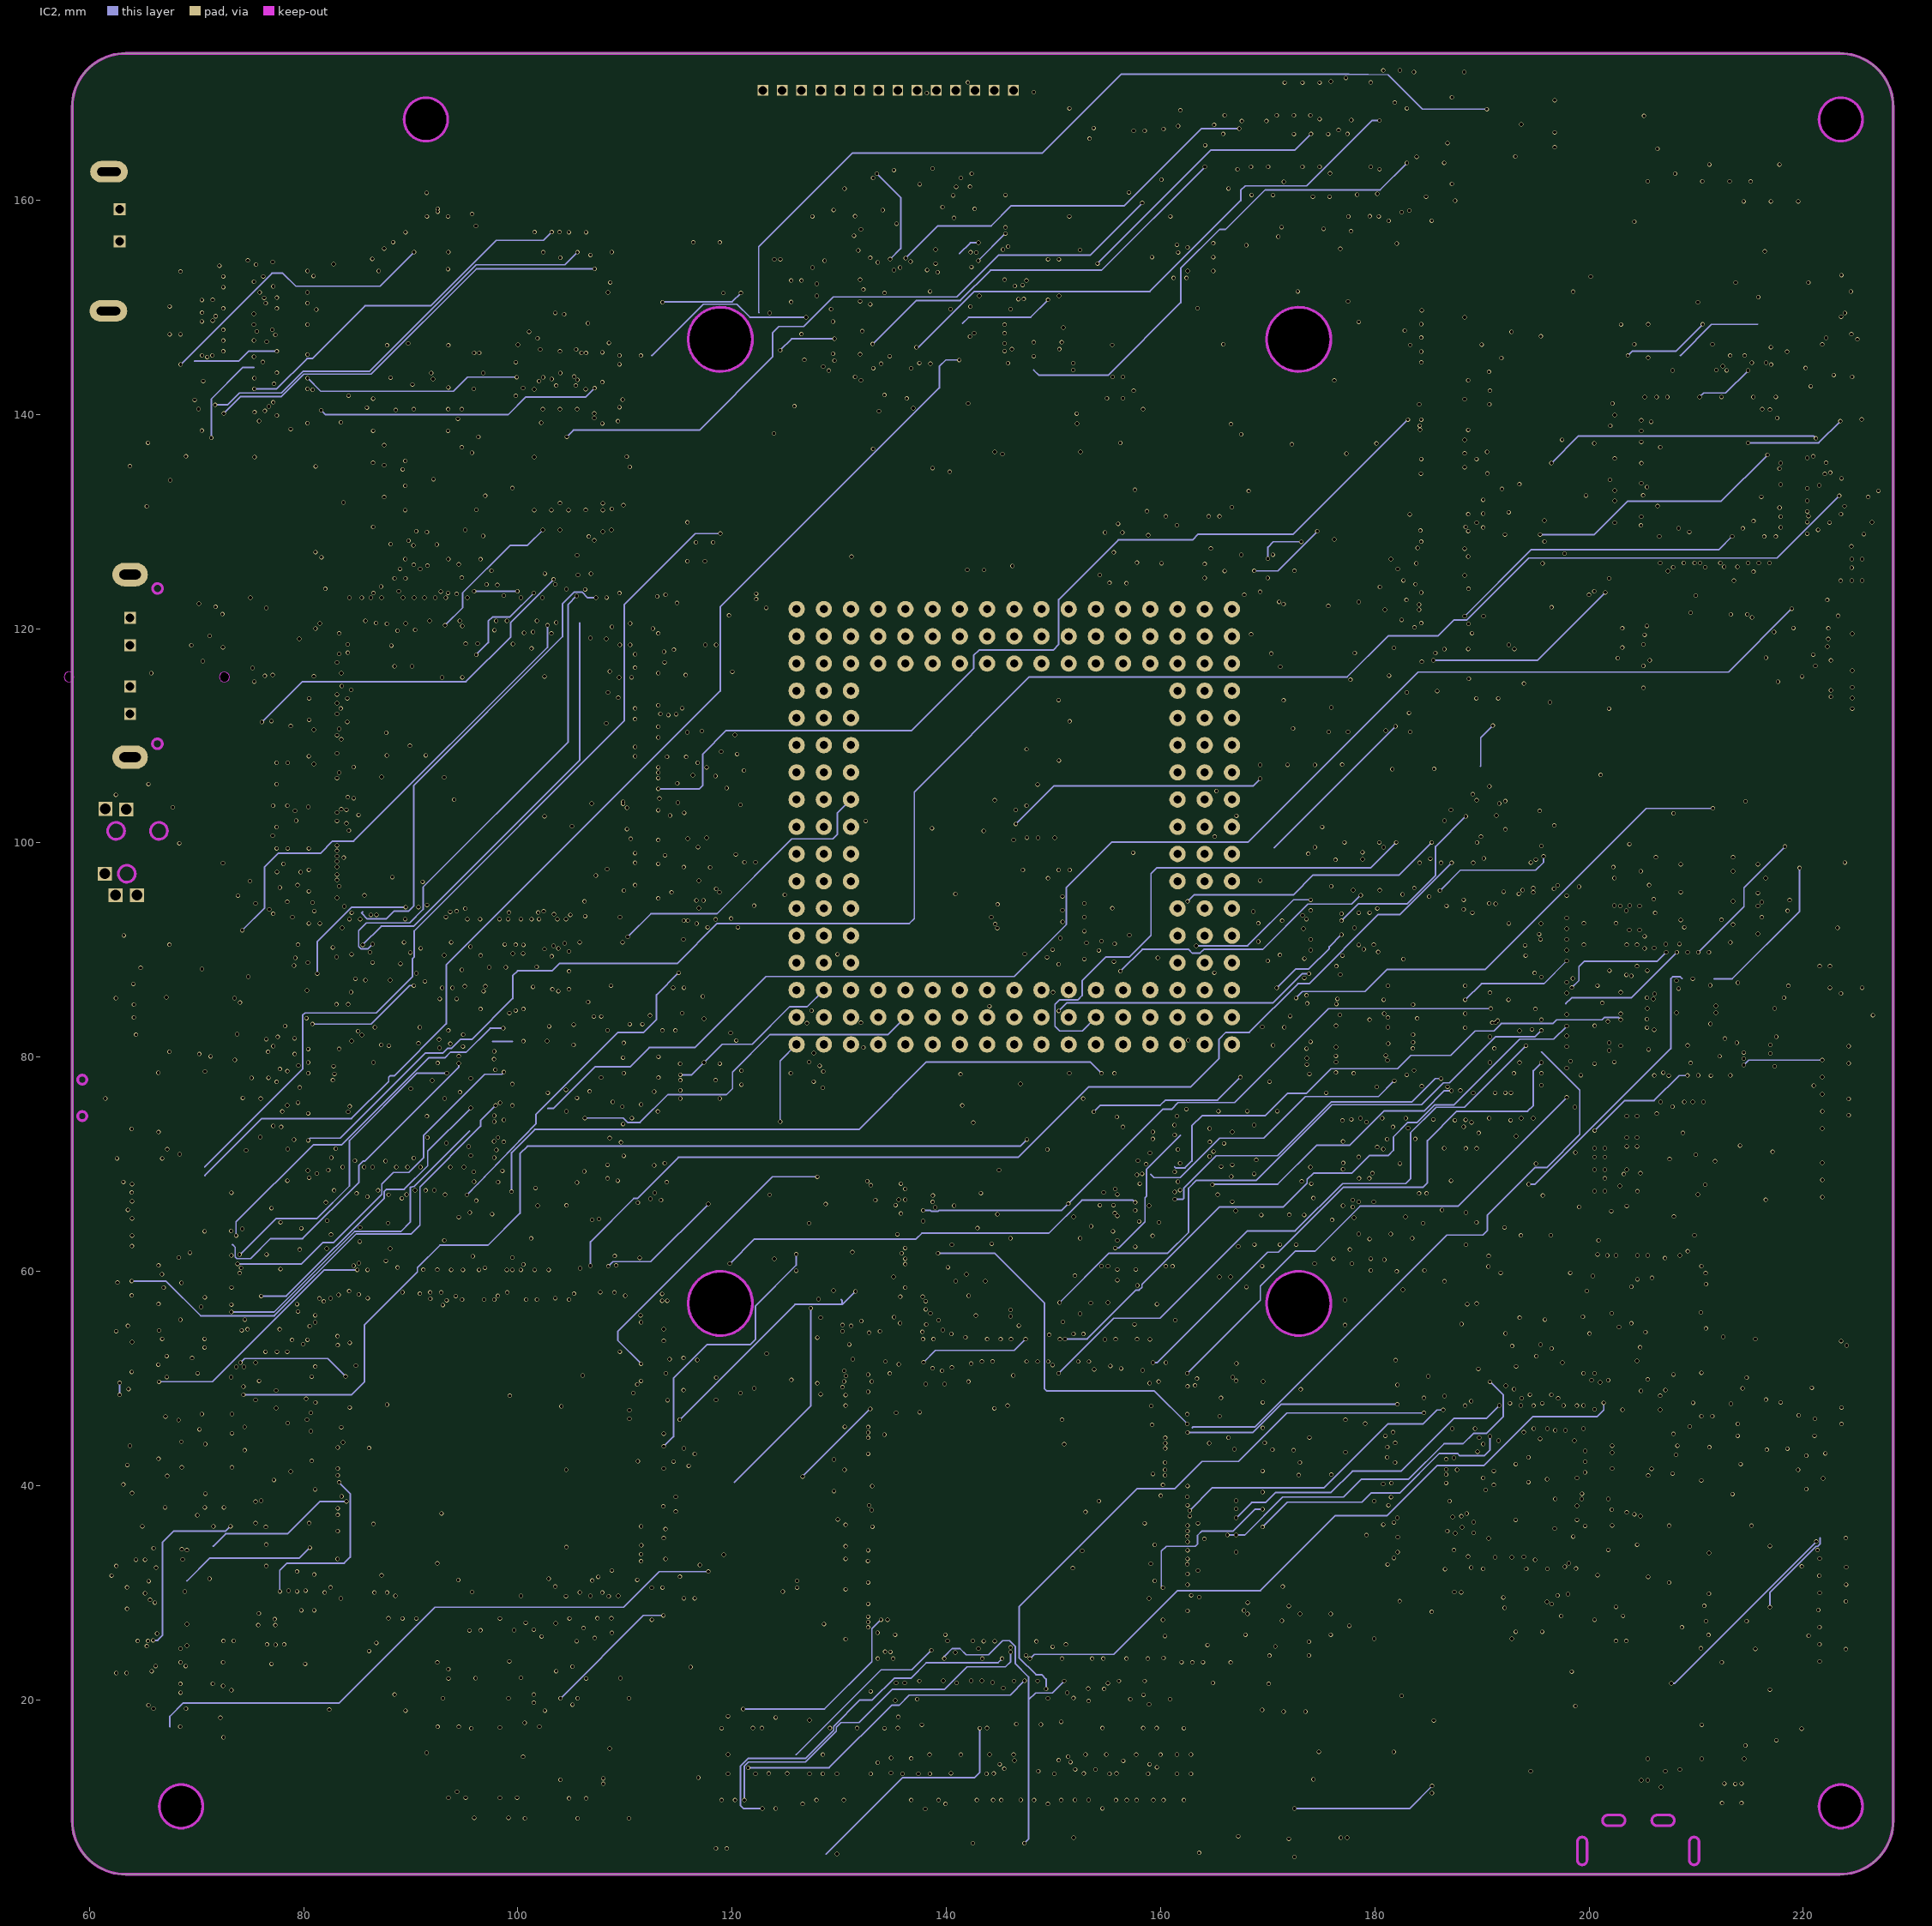
[diagram p7: IC2]
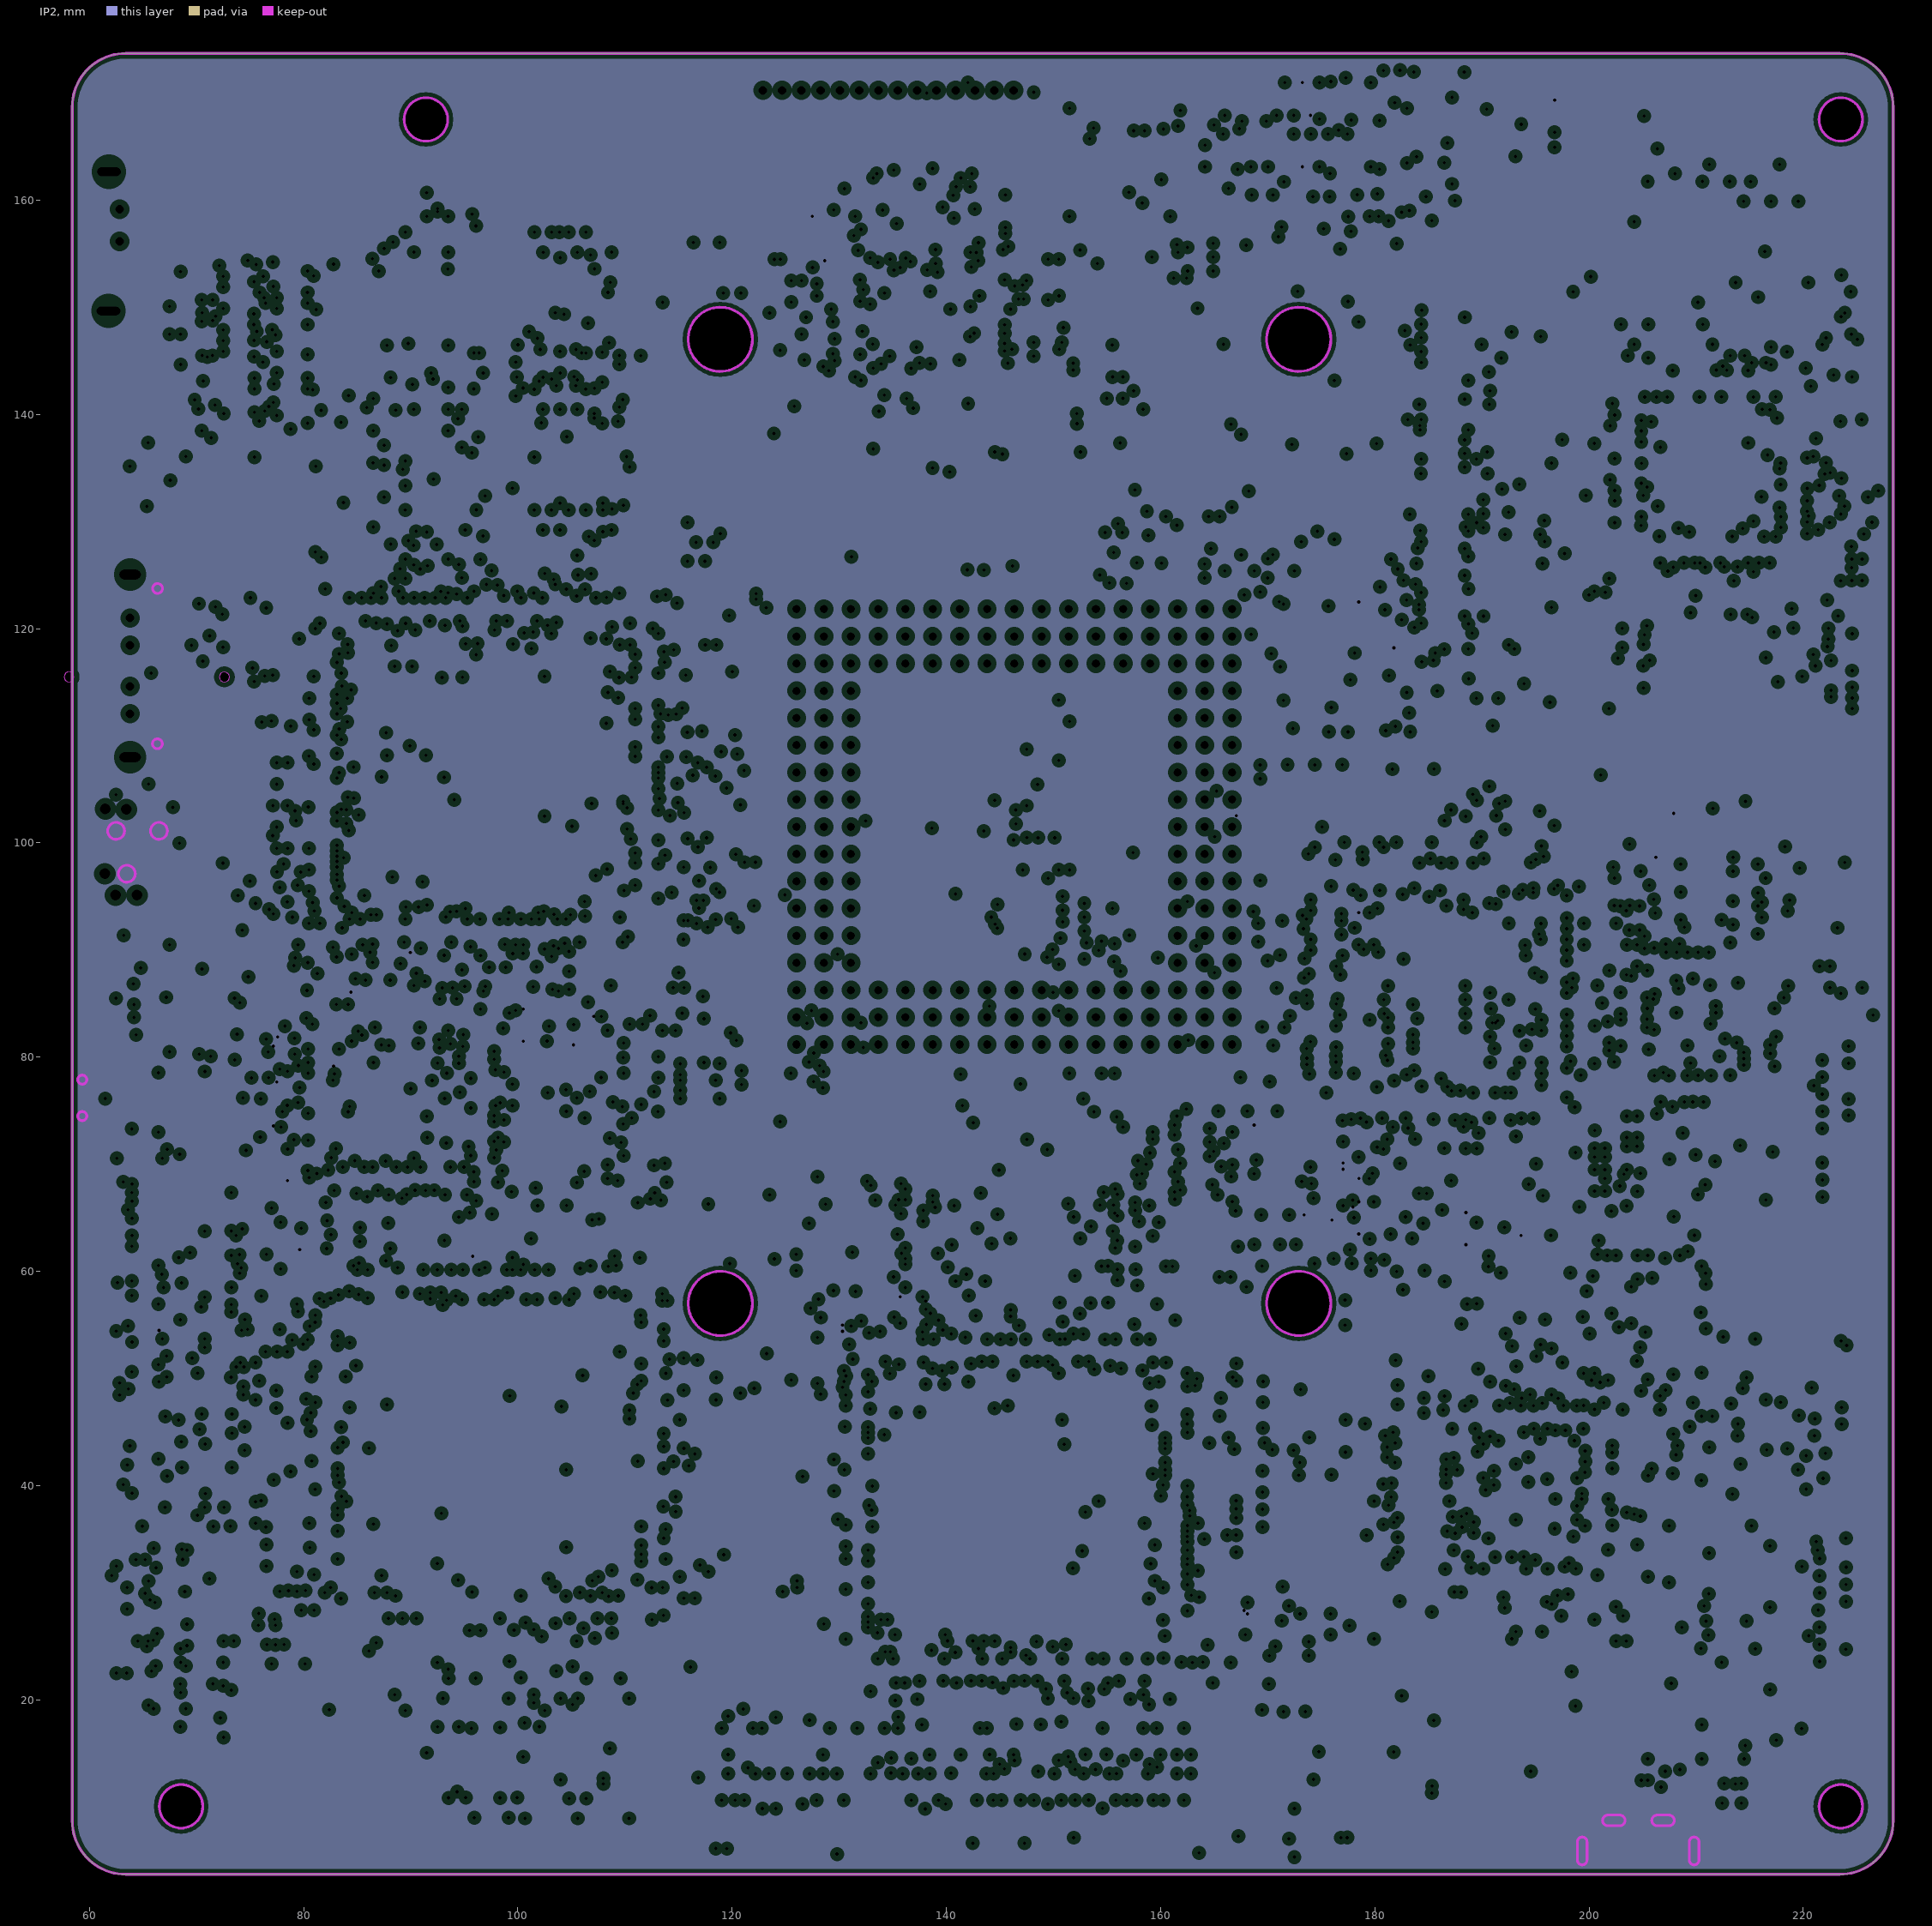
[diagram p8: IP2, clearances drawn from the general rule]
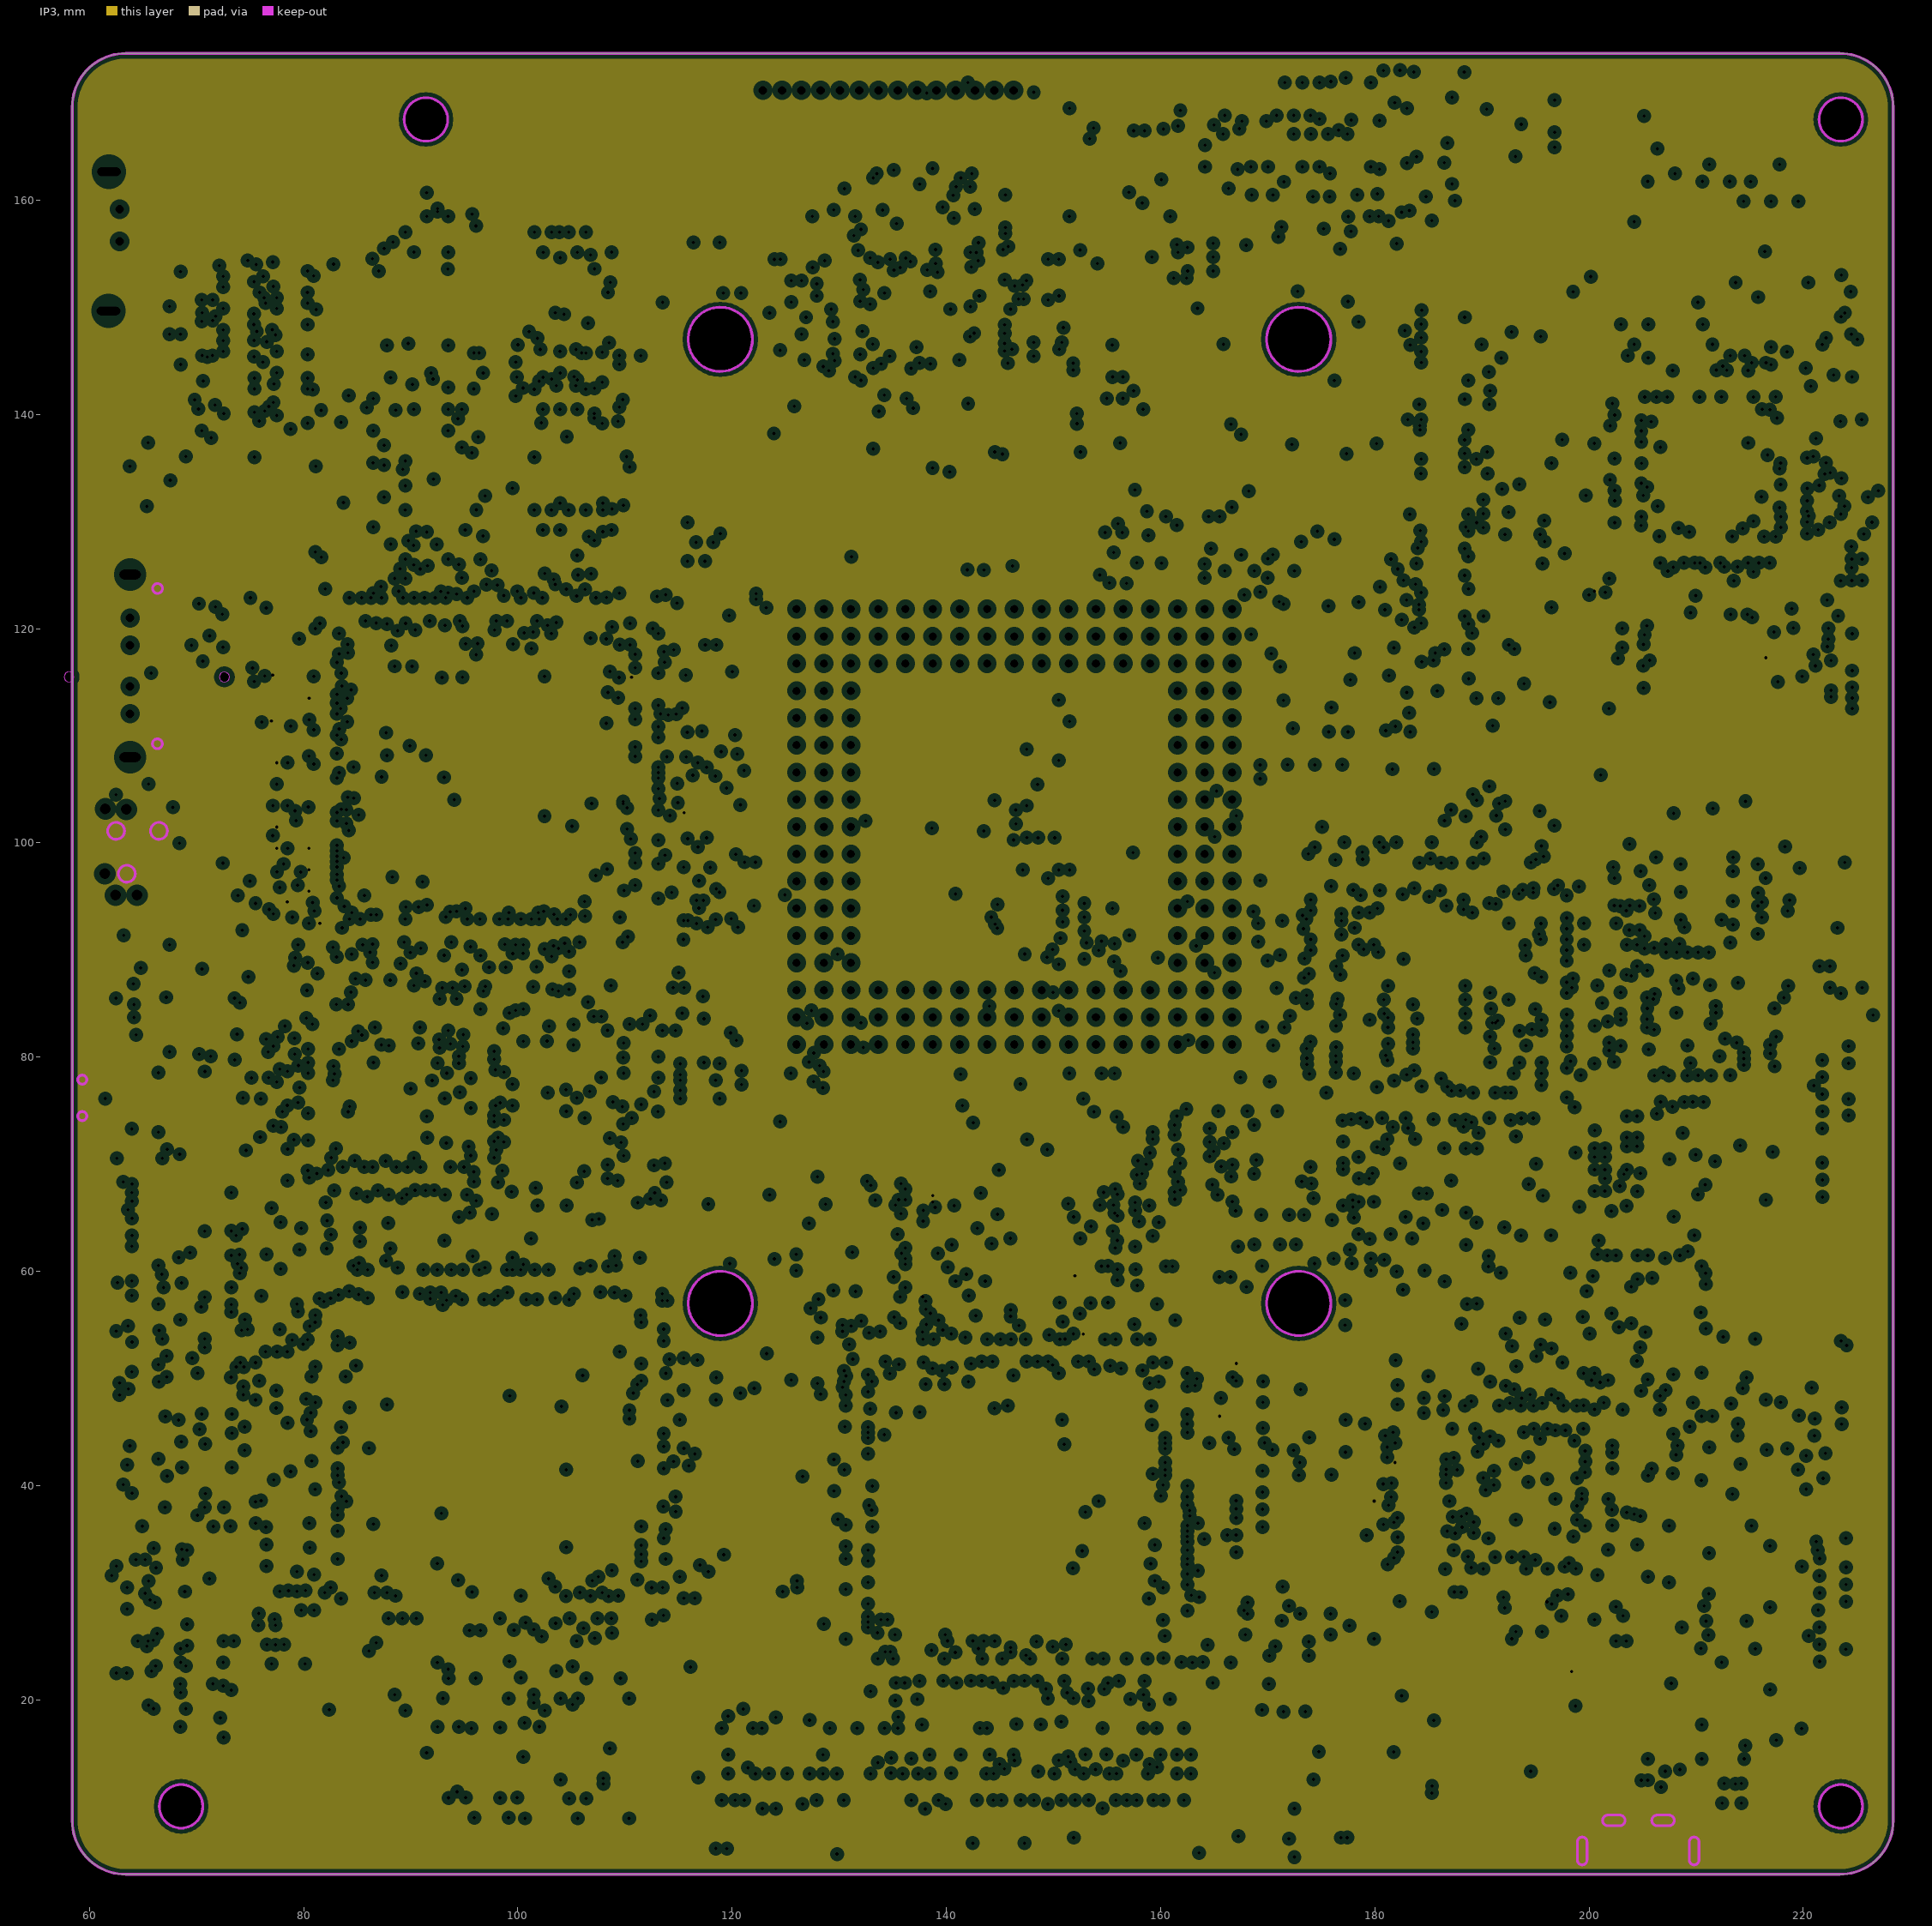
[diagram p9: IP3, clearances drawn from the general rule]
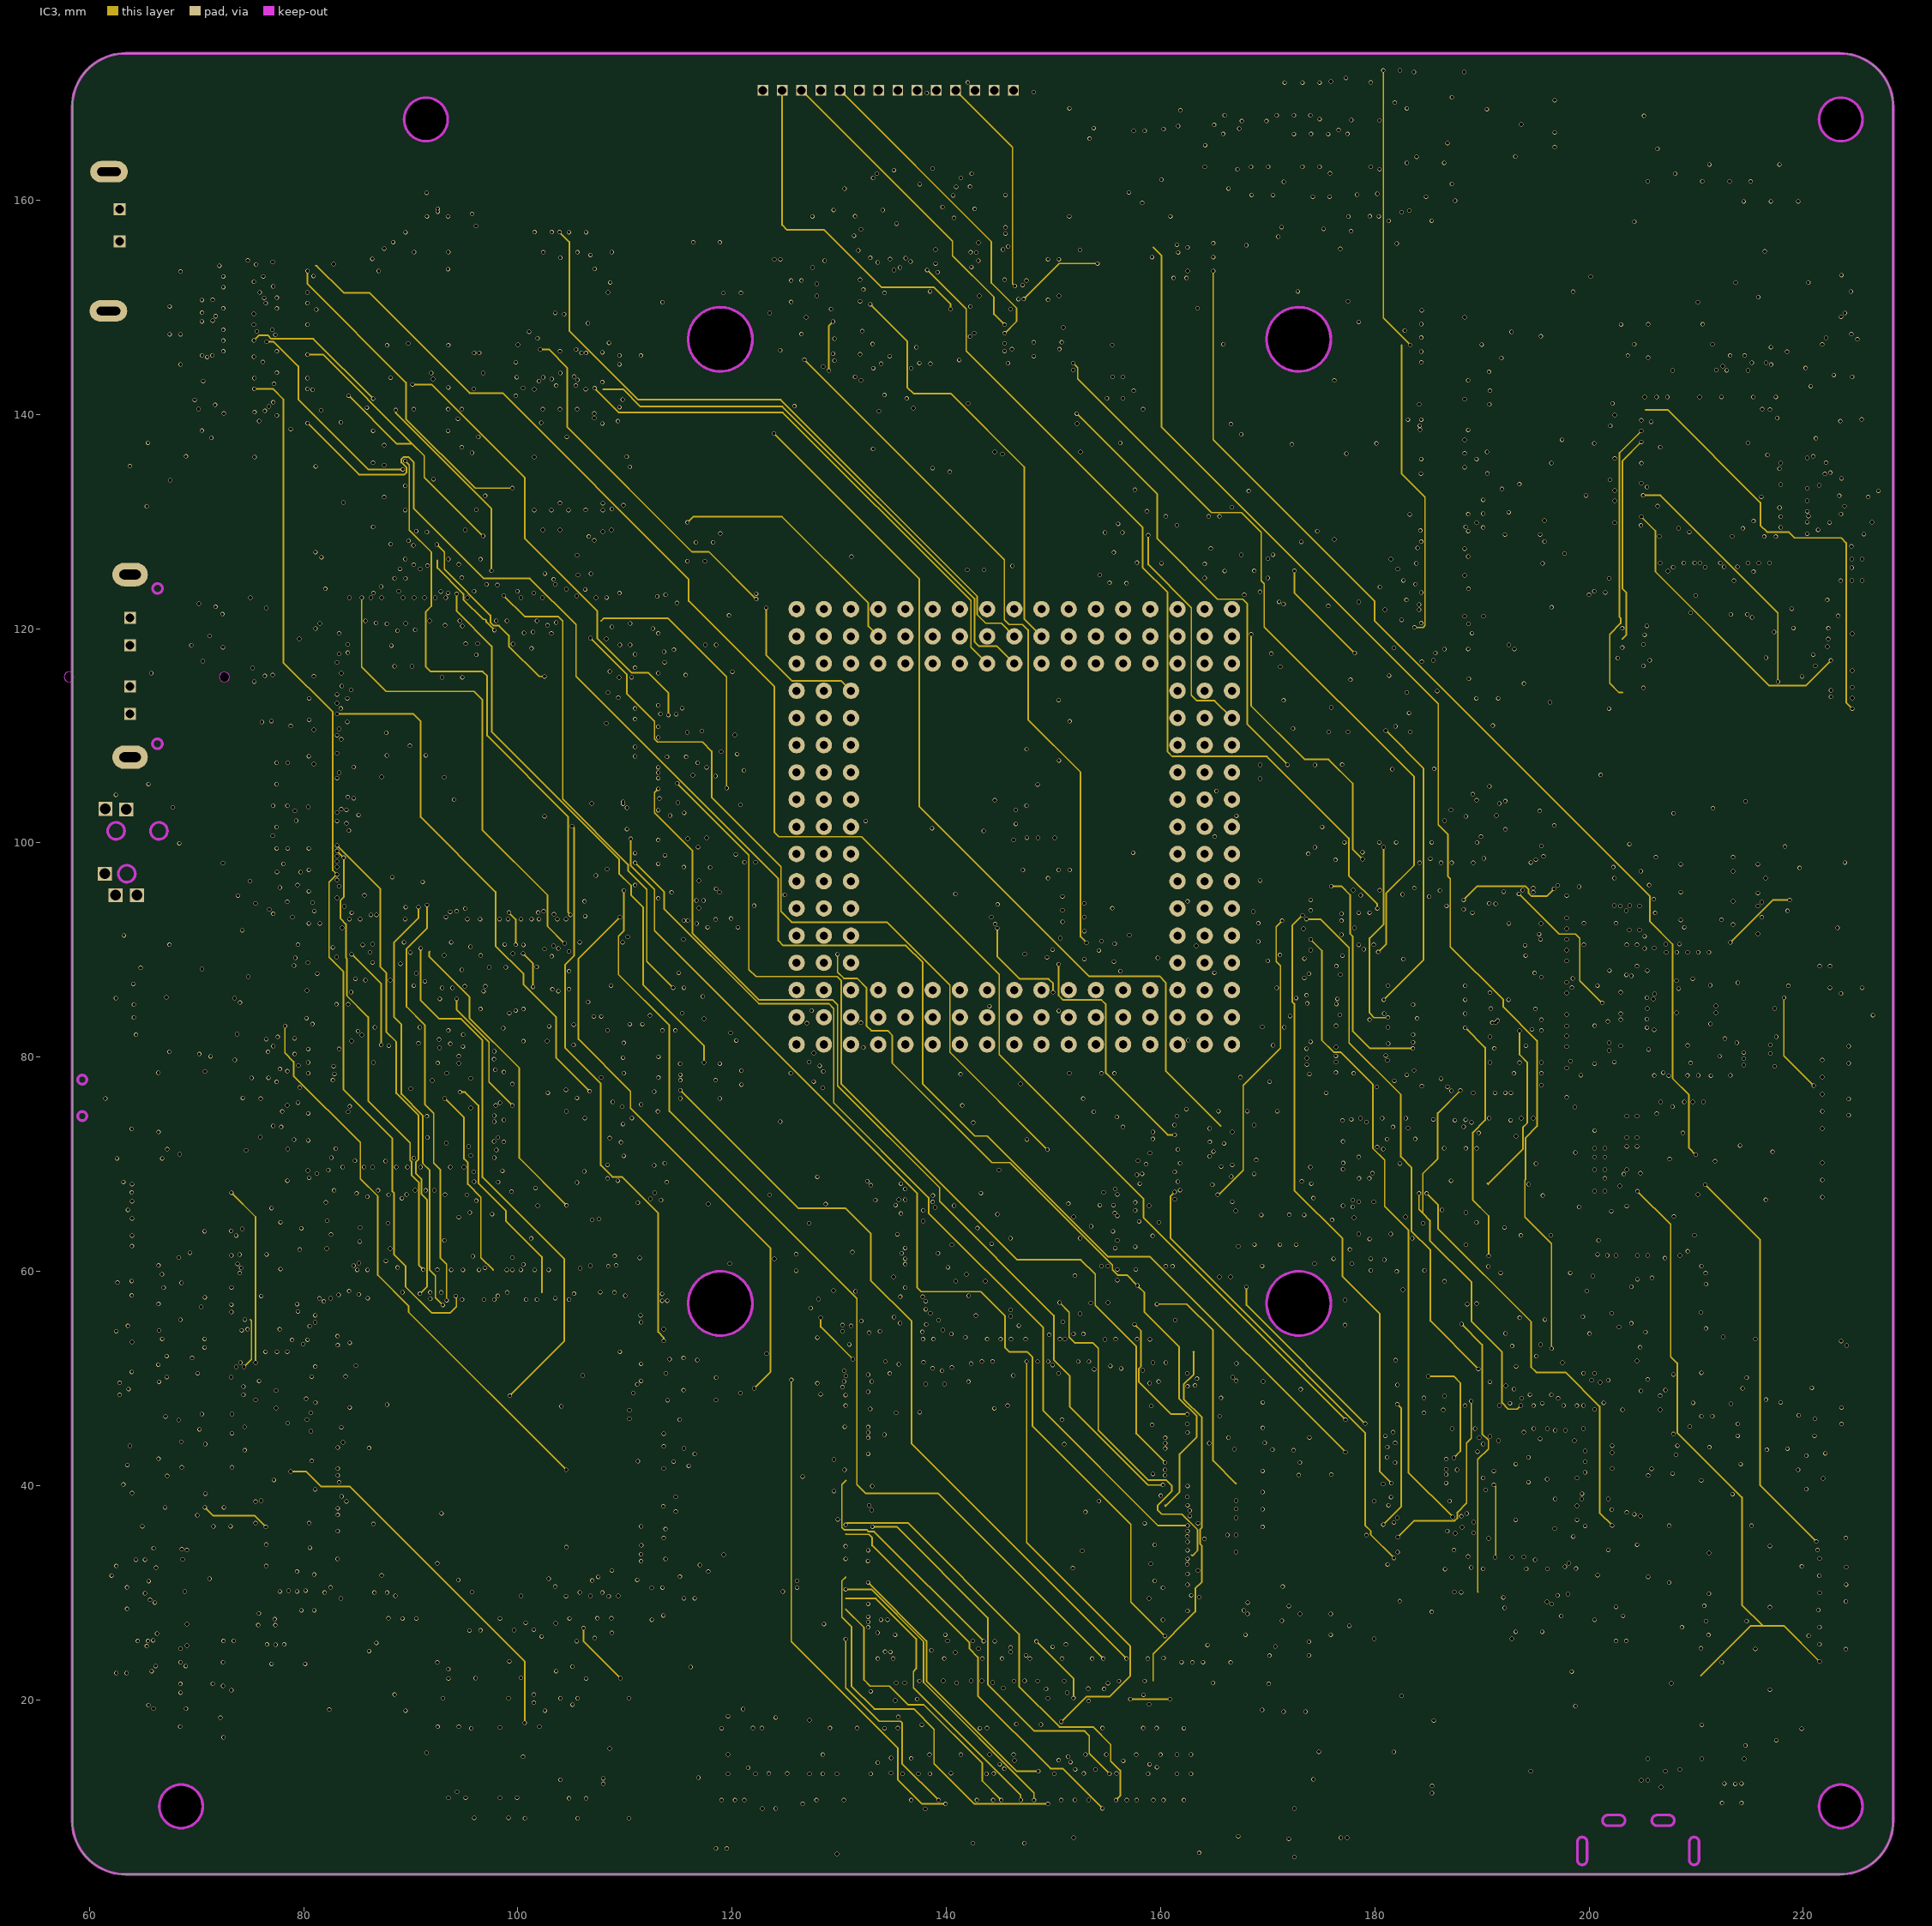
[diagram p10: IC3]
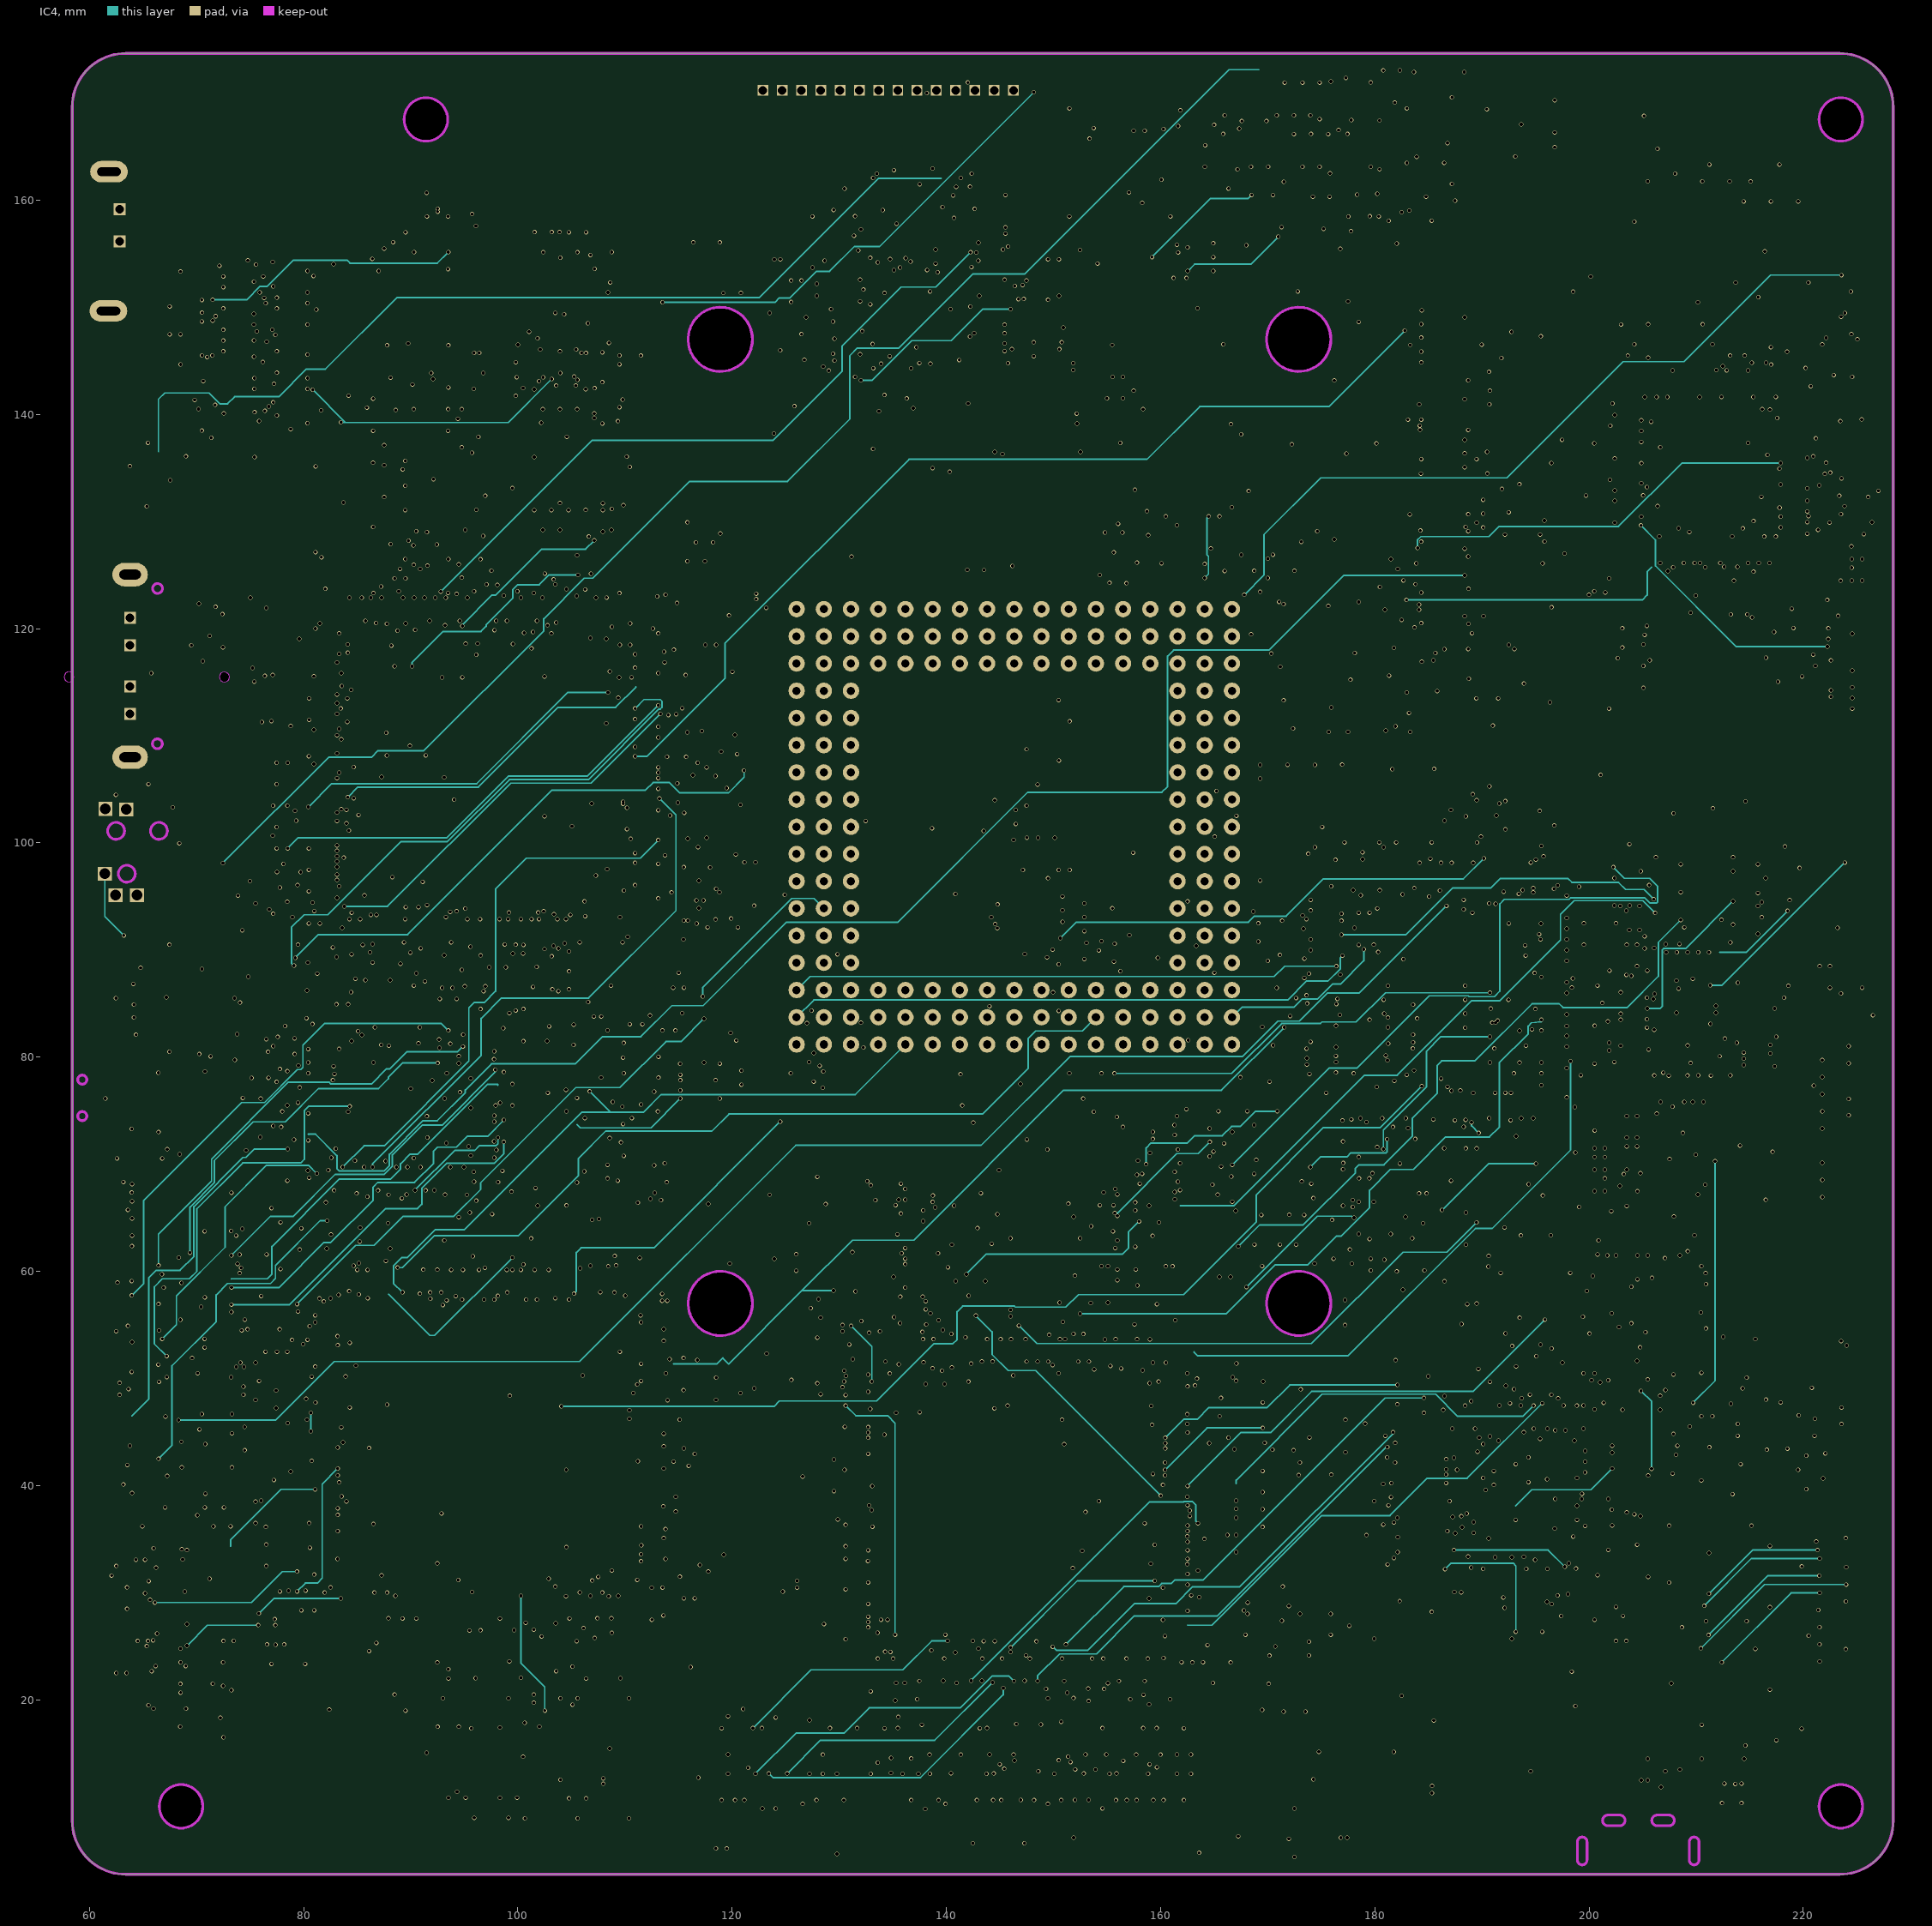
[diagram p11: IC4]
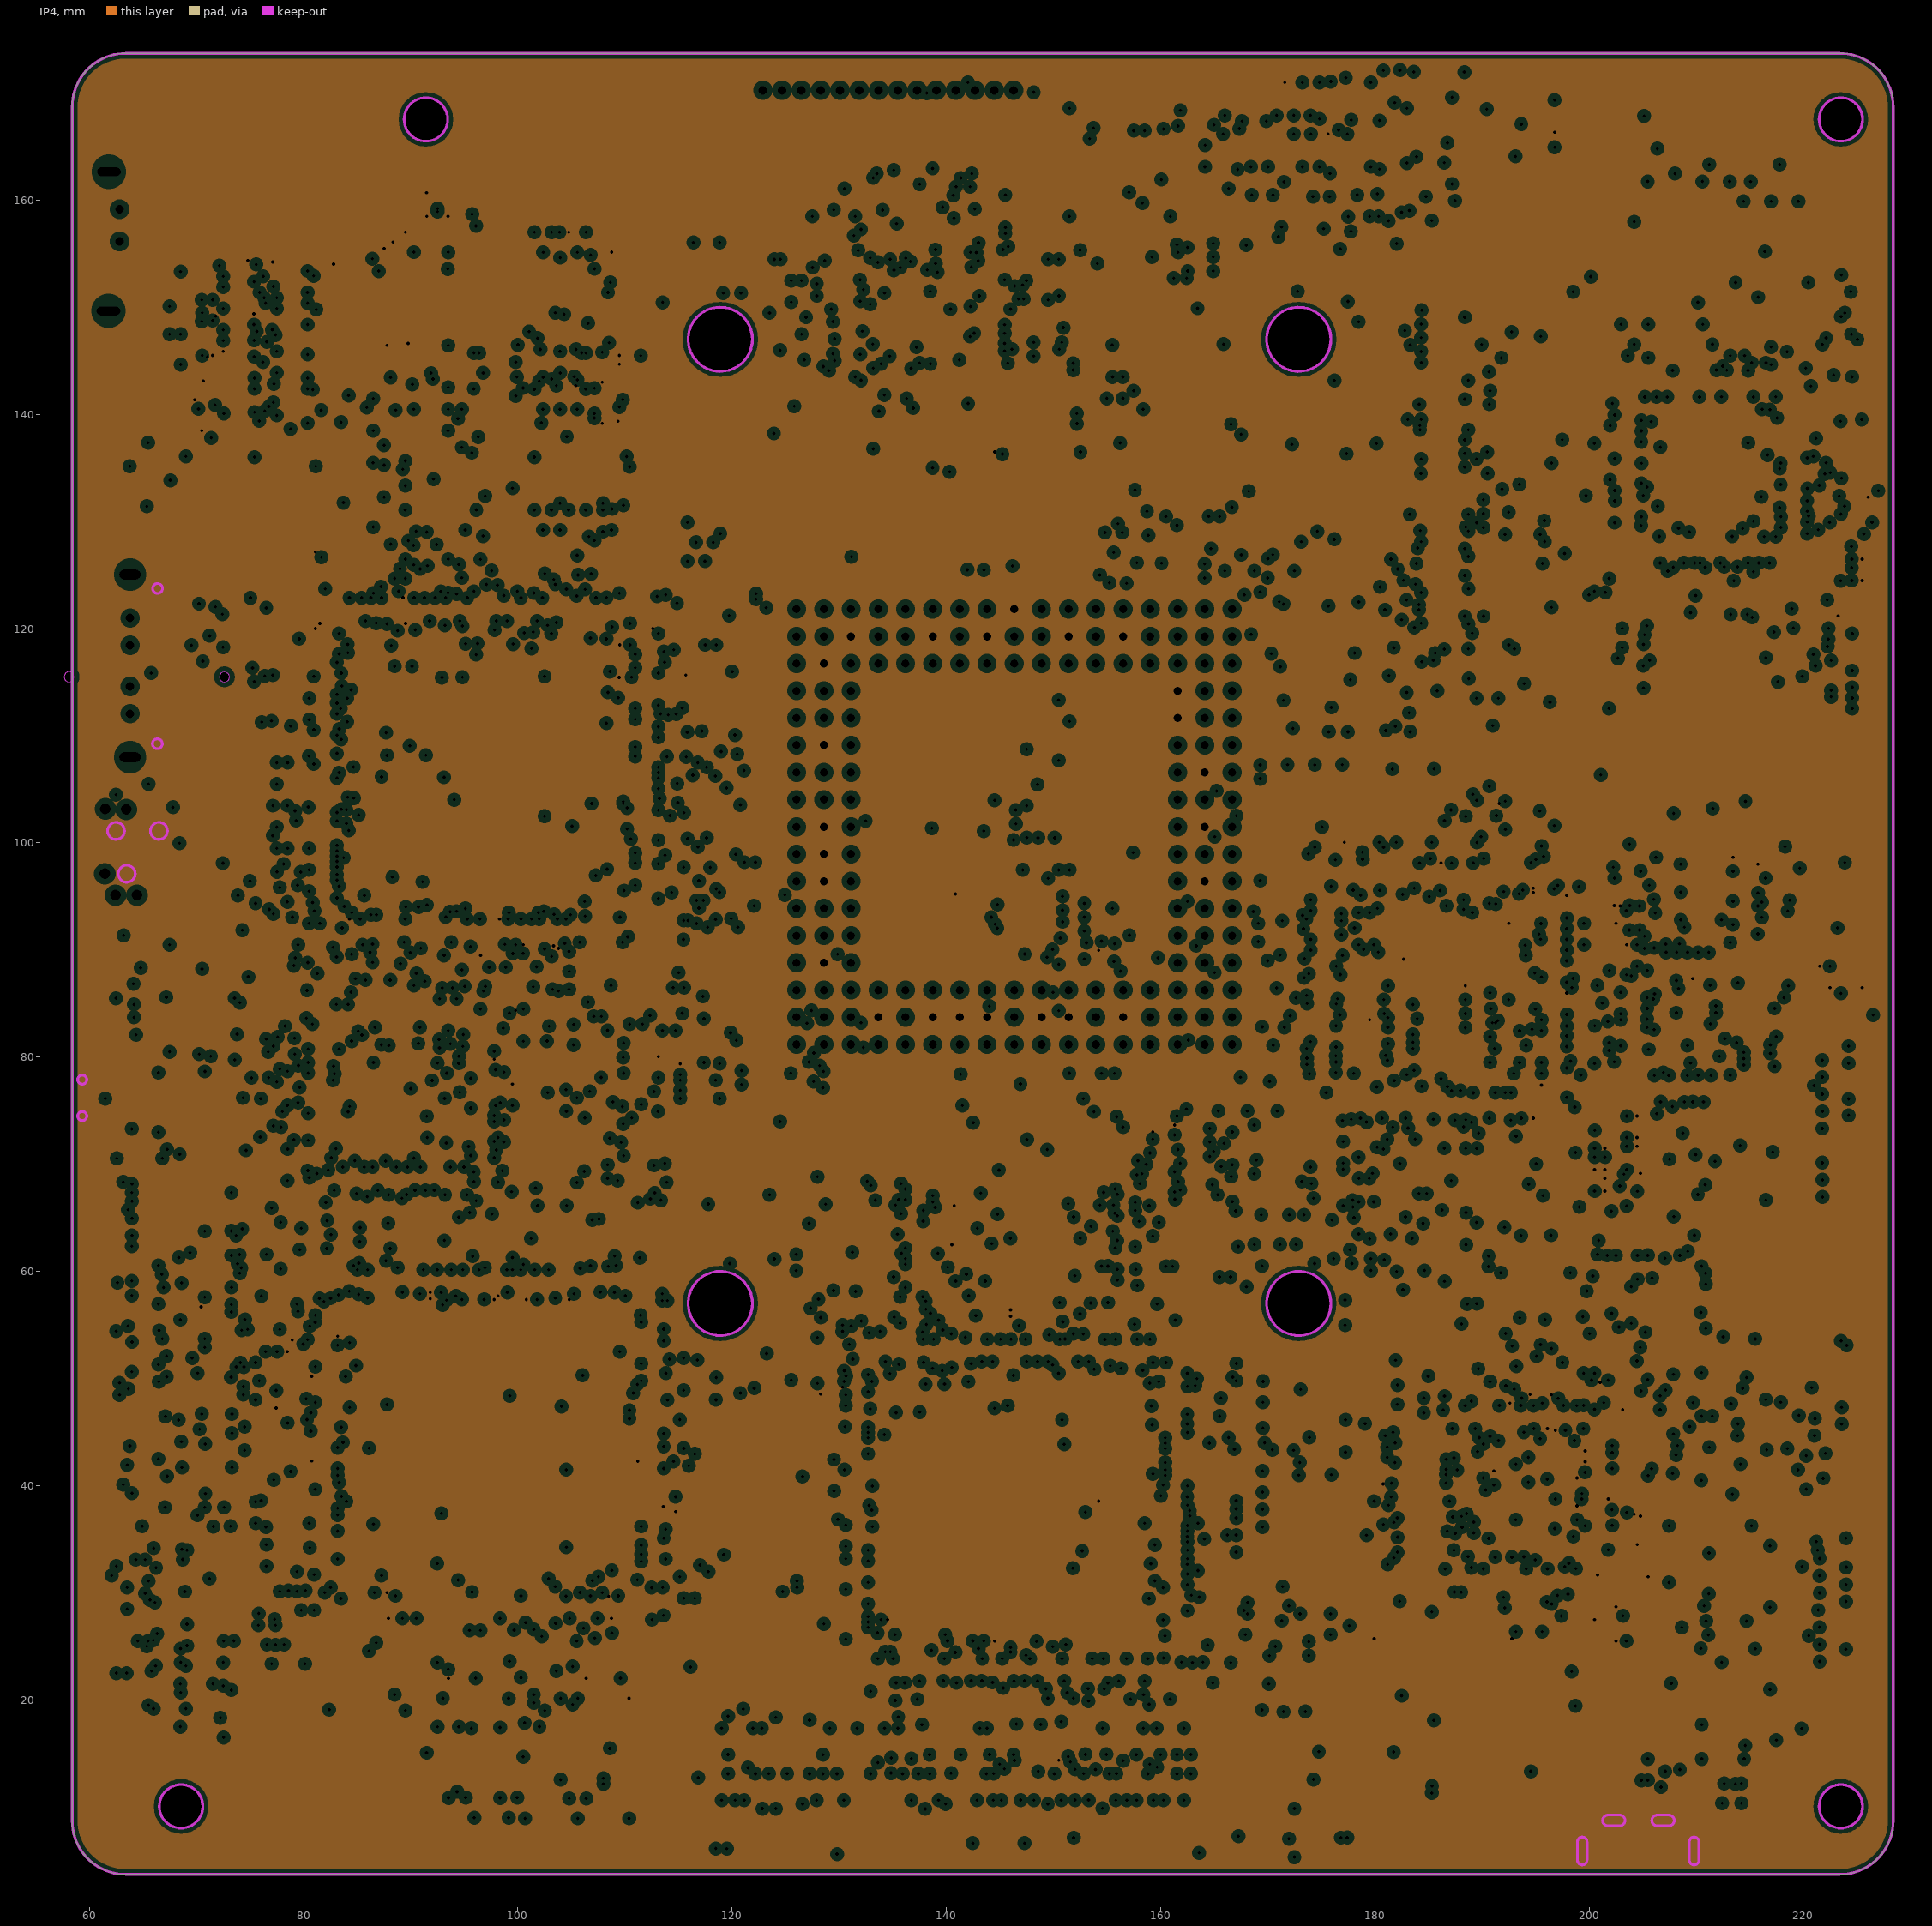
[diagram p12: IP4, clearances drawn from the general rule]
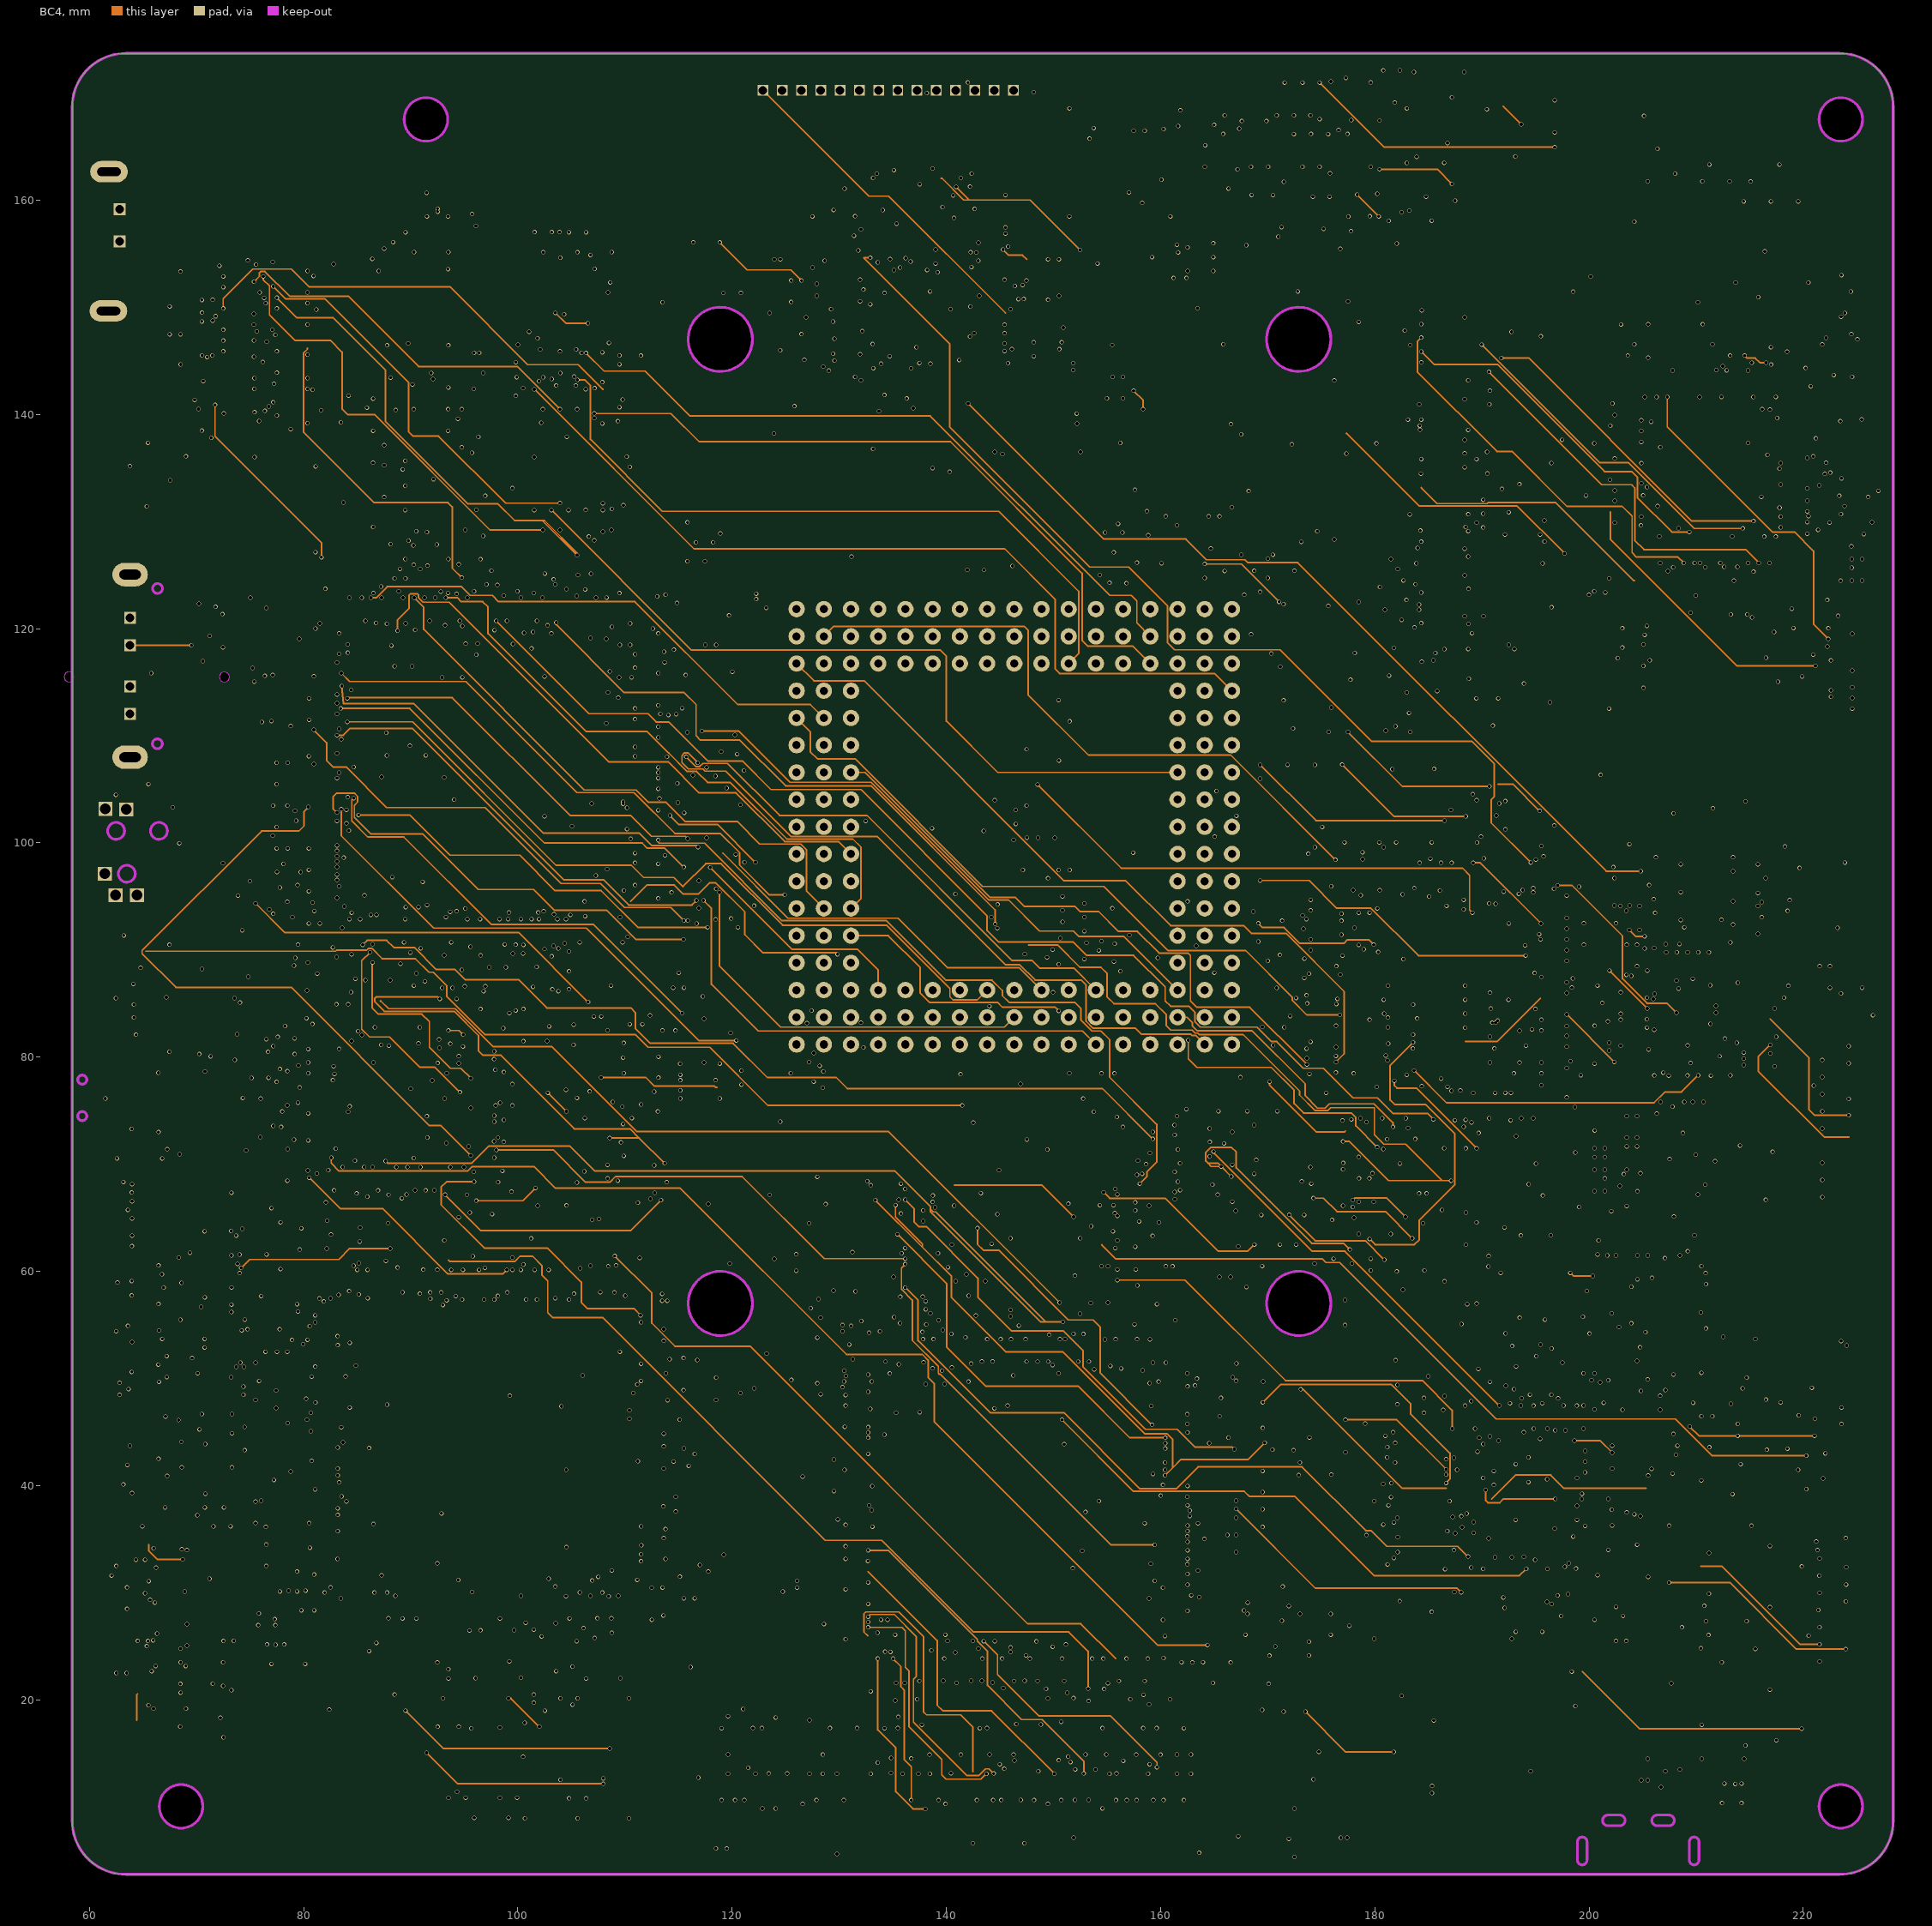
[diagram p13: BC4]
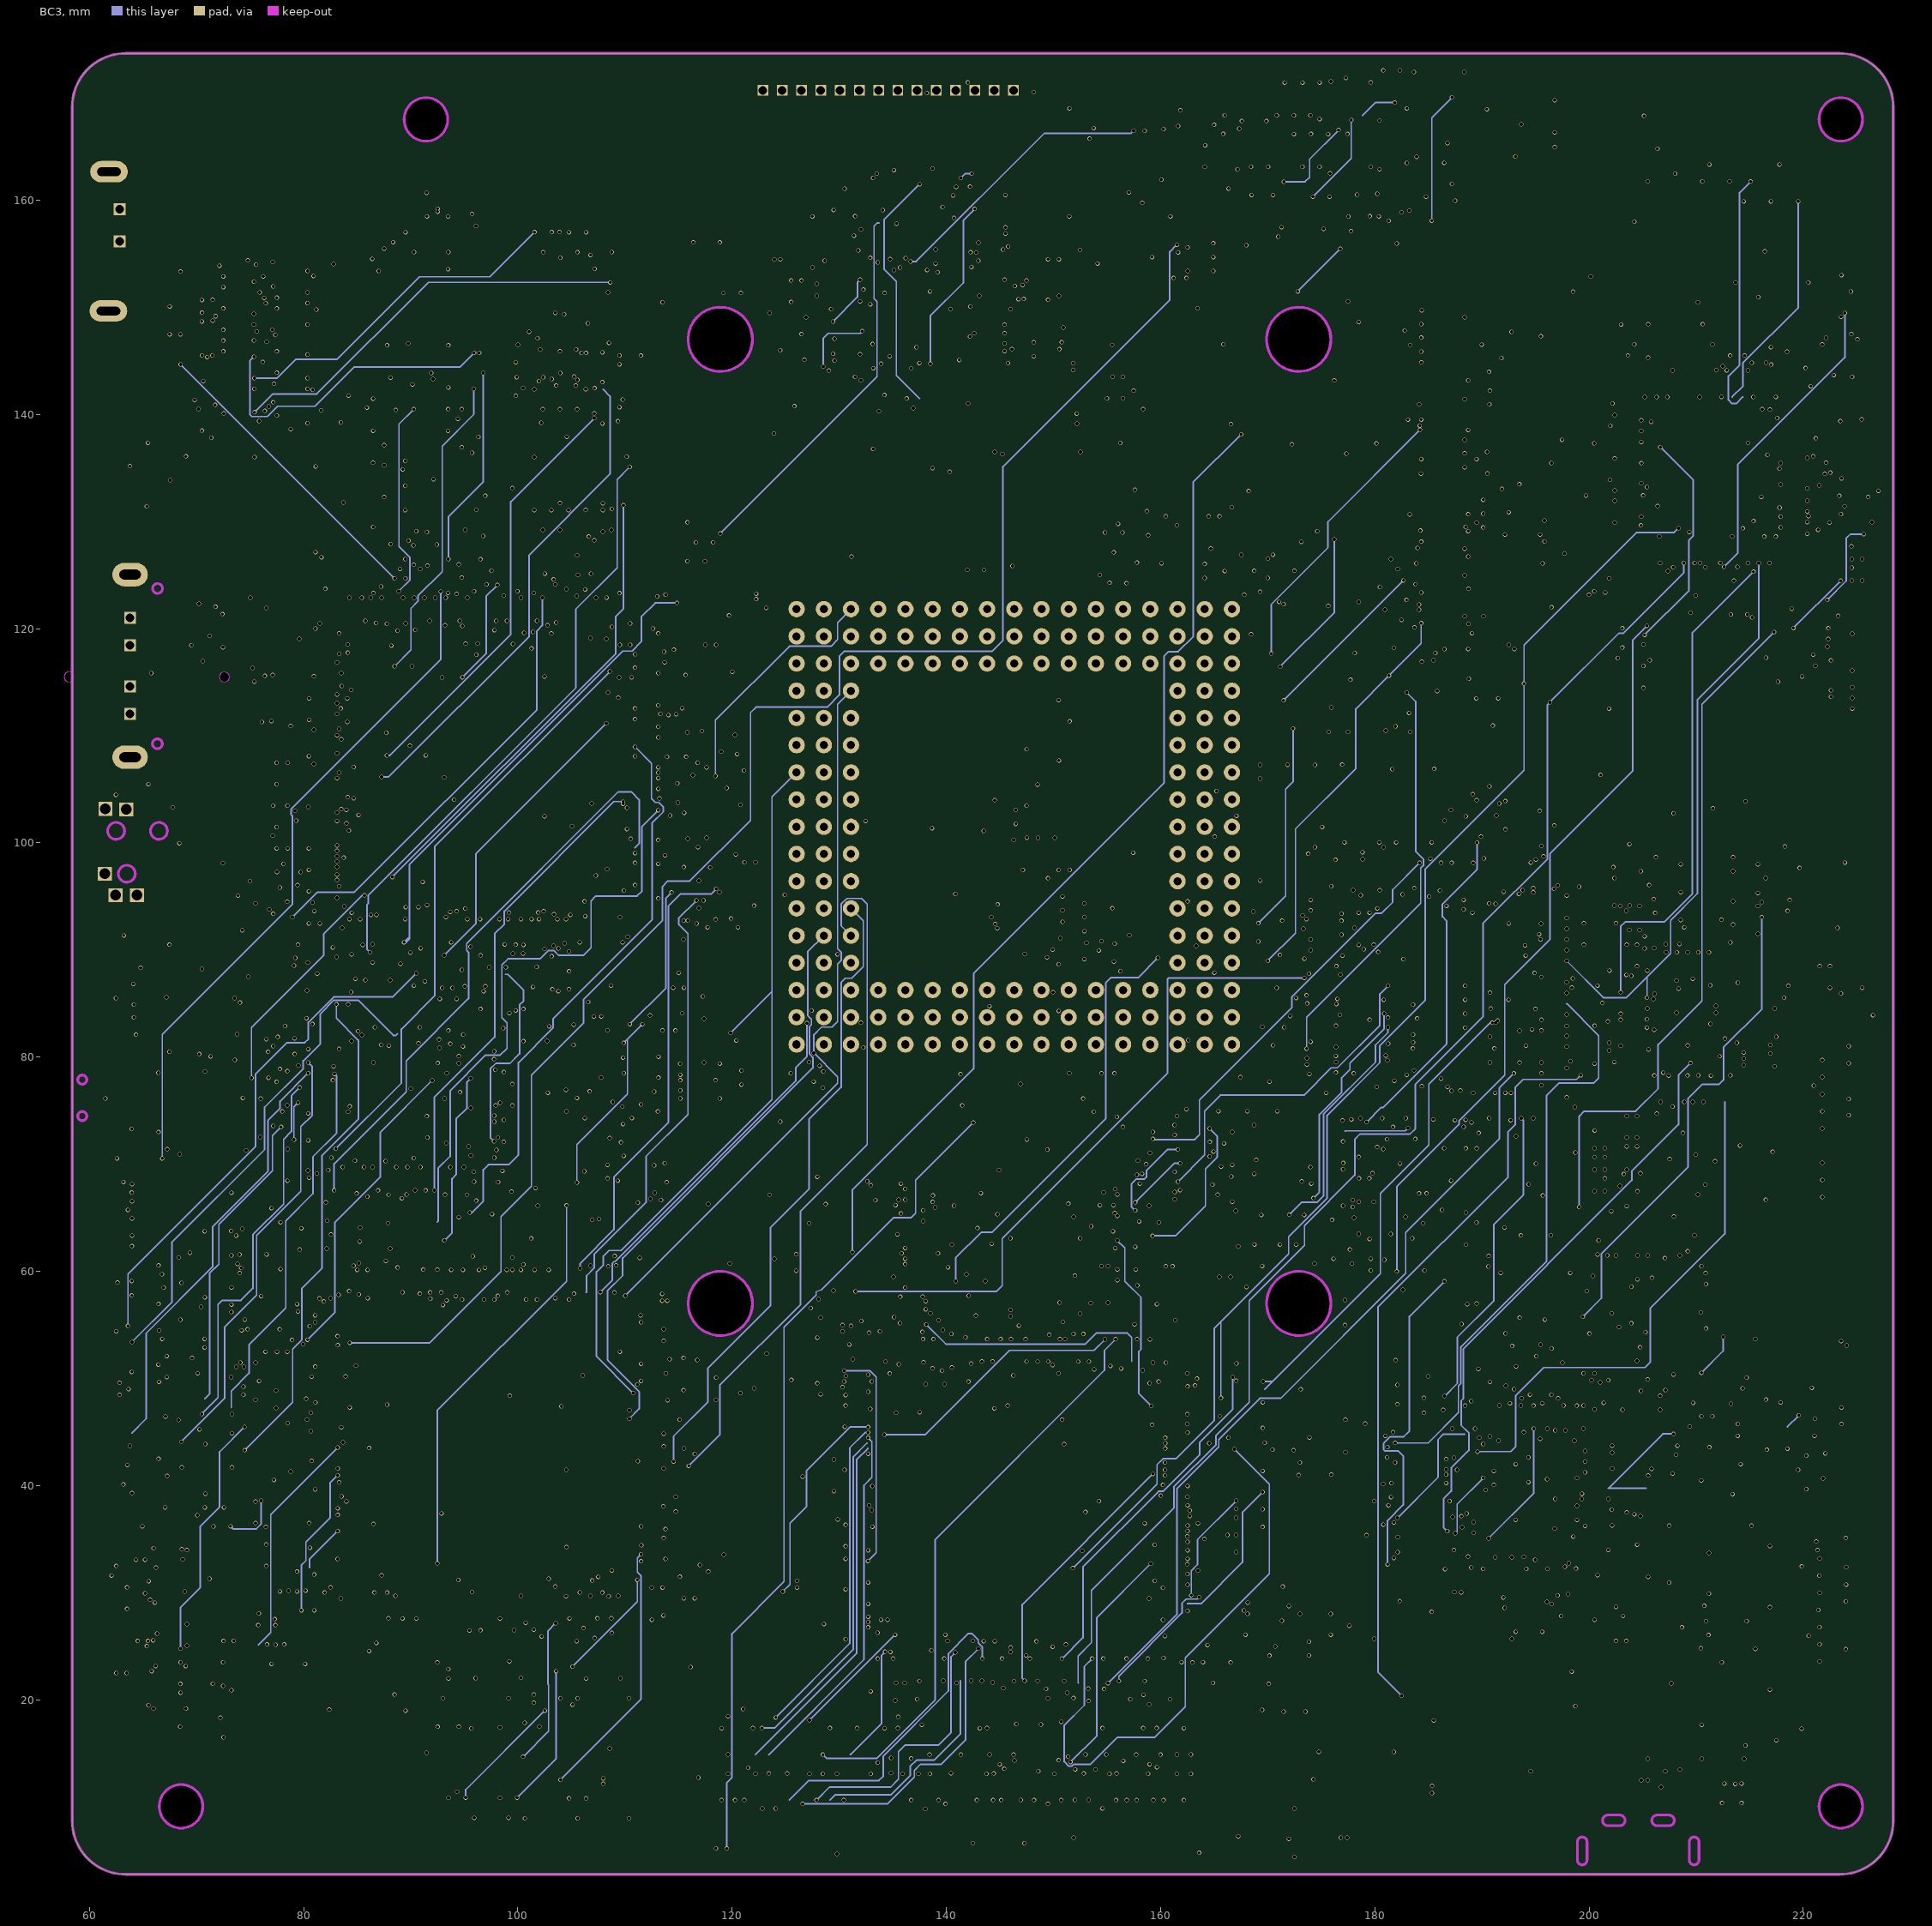
[diagram p14: BC3]
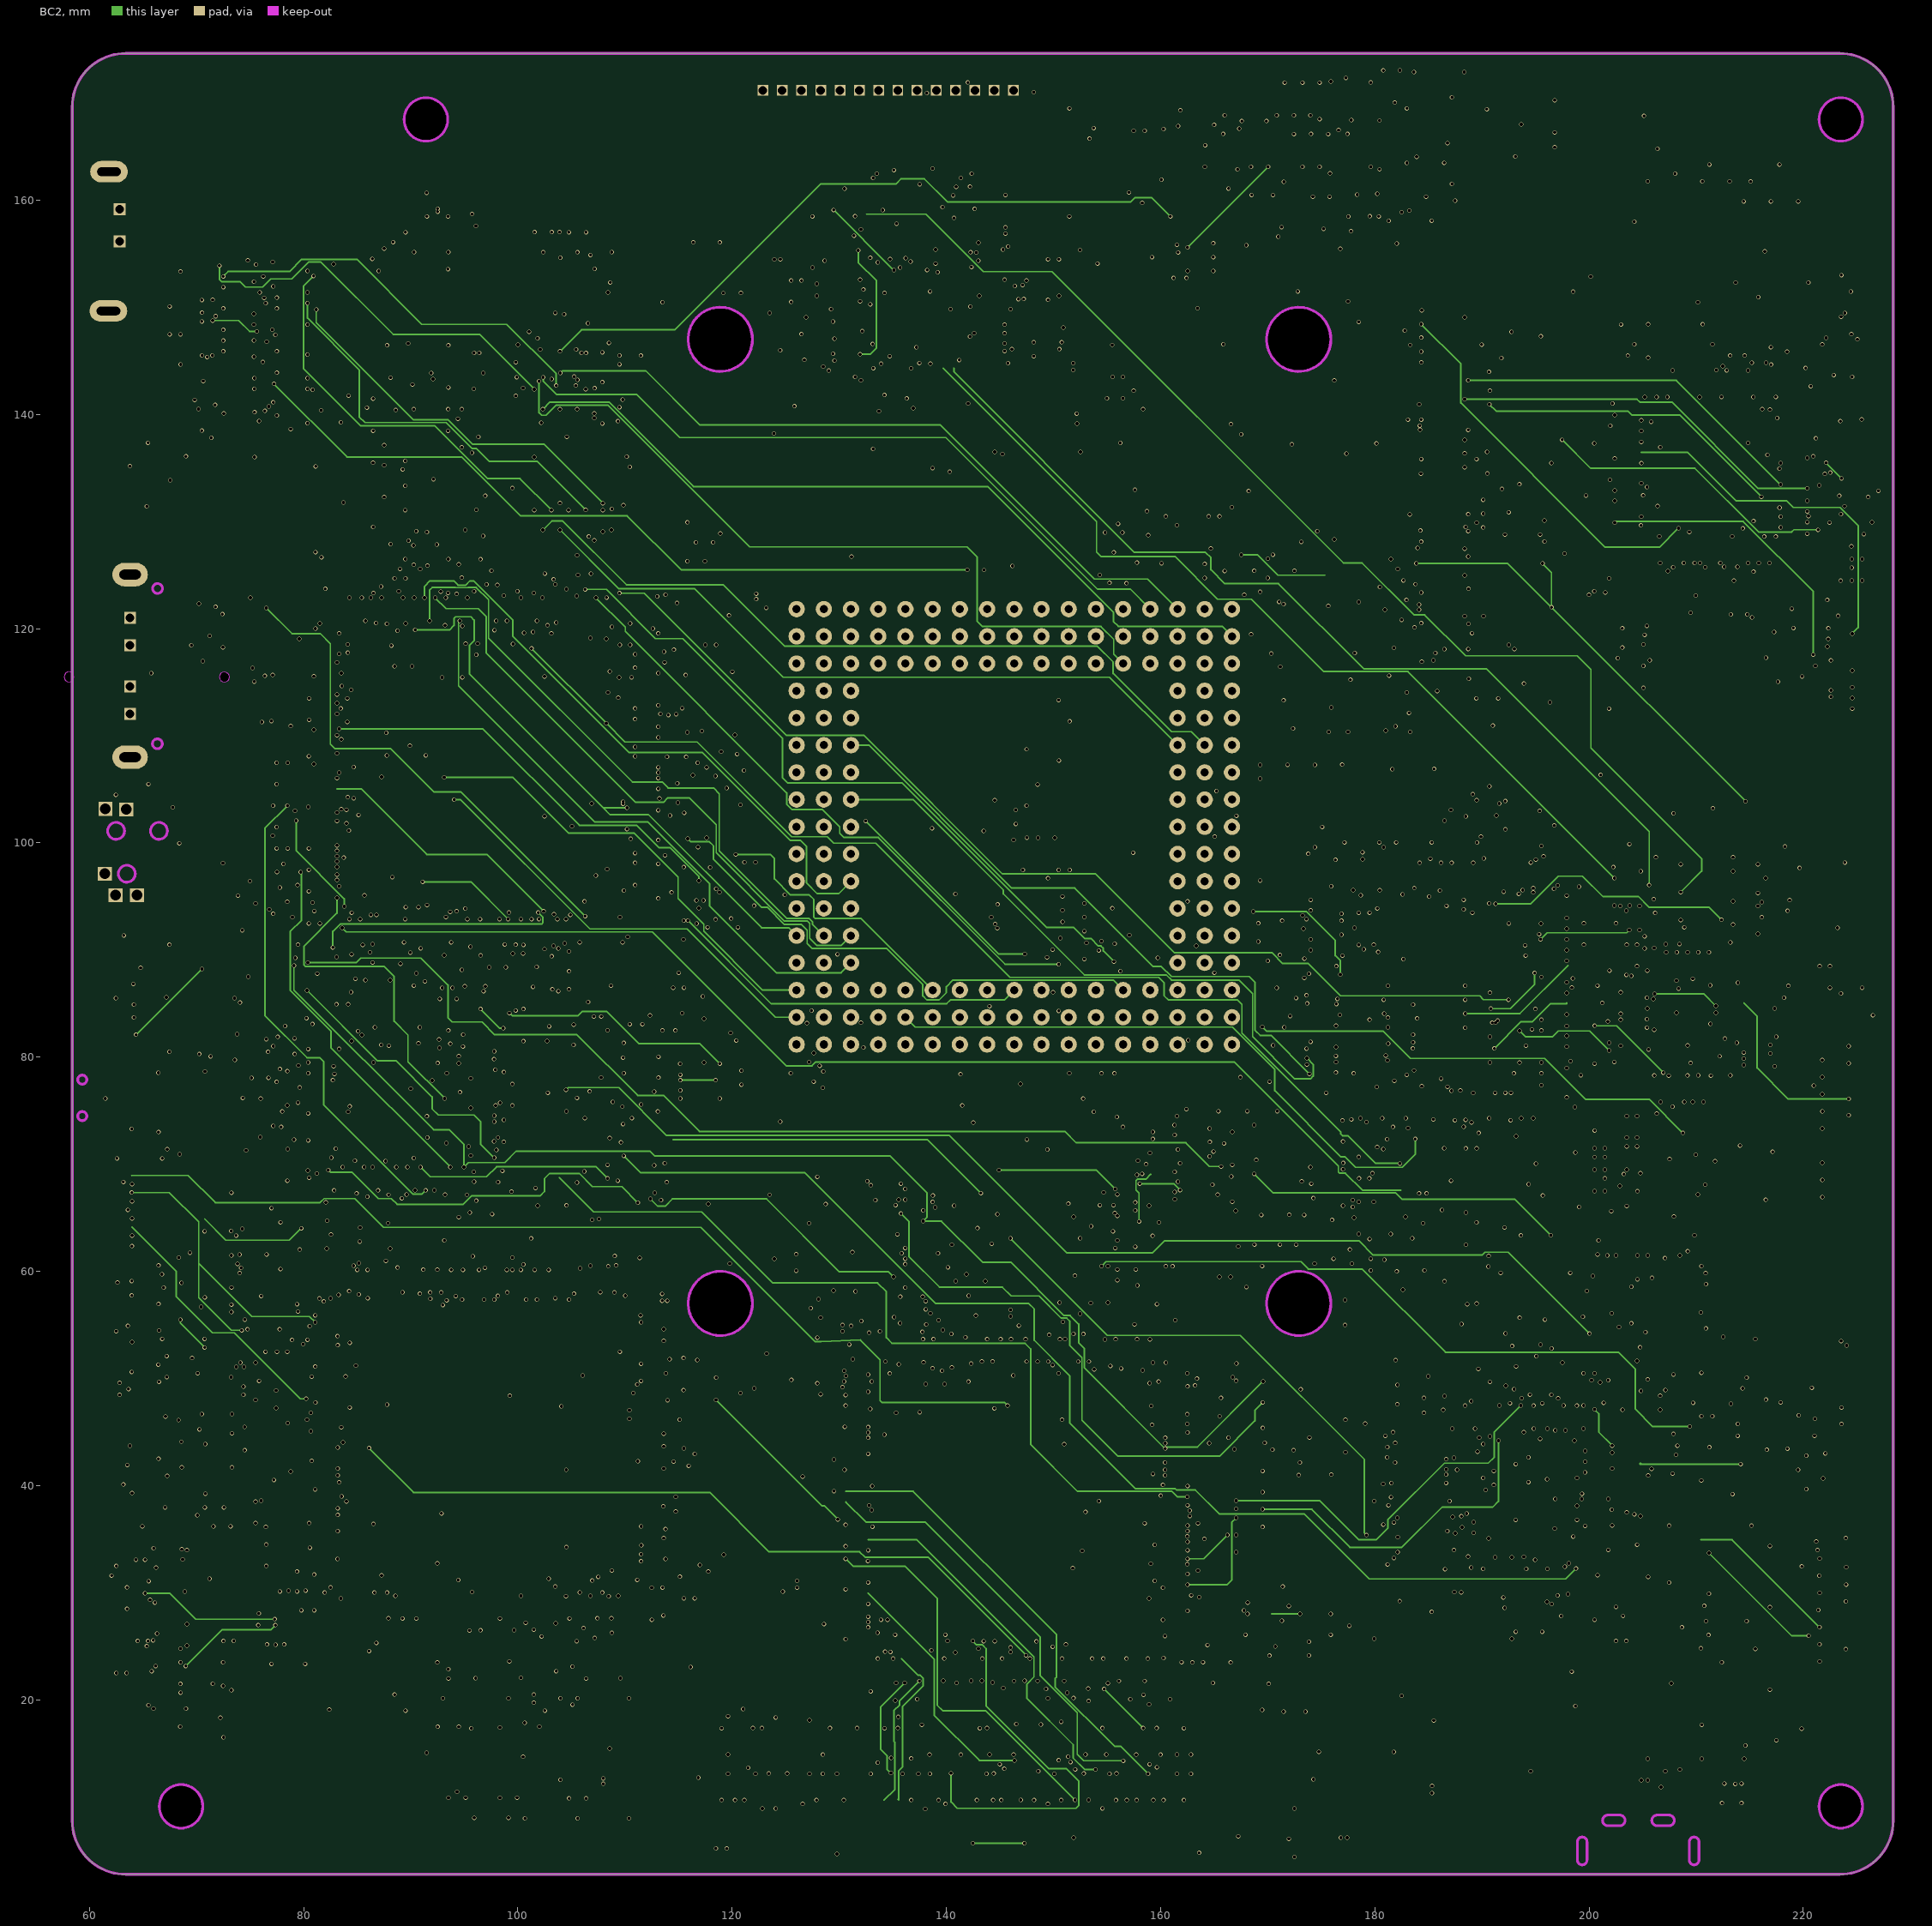
[diagram p15: BC2]

## Layer stack, top to bottom
F.Mask: solder mask 0.0102, Solder Resist, Dk 3.5
FC1: signal copper 0.0356
Dielectric 1: dielectric 0.32, FR-4, Dk 4.8
FC2: signal copper 0.0356
Dielectric 4: prepreg 0.0711, PP-006, Dk 4.1
FC3: signal copper 0.035
Dielectric 5: prepreg 0.0711, PP-006, Dk 4.1
FC4: signal copper 0.035
Dielectric2: dielectric 0.32, FR-4, Dk 4.8
IP1: plane copper 0.0356, net GND
Dielectric3: dielectric 0.32, FR-4, Dk 4.8
IC1: signal copper 0.0356
Dielectric4: dielectric 0.32, FR-4, Dk 4.8
IC2: signal copper 0.0356
Dielectric 2: core 0.1016, Core-009, Dk 4.5
IP2: plane copper 0.035, net PNET5
Dielectric 3: prepreg 0.0711, PP-006, Dk 4.1
IP3: plane copper 0.035, net PNET7
Dielectric5: dielectric 0.32, FR-4, Dk 4.8
IC3: signal copper 0.0356
Dielectric6: dielectric 0.32, FR-4, Dk 4.8
IC4: signal copper 0.0356
Dielectric7: dielectric 0.32, FR-4, Dk 4.8
IP4: plane copper 0.0356, net PNET1
Dielectric8: dielectric 0.32, FR-4, Dk 4.8
BC4: signal copper 0.035
Dielectric 7: prepreg 0.0711, PP-006, Dk 4.1
BC3: signal copper 0.035
Dielectric 6: prepreg 0.0711, PP-006, Dk 4.1
BC2: signal copper 0.0356
Dielectric9: dielectric 0.32, FR-4, Dk 4.8
BC1: signal copper 0.0356
B.Mask: solder mask 0.0102, Solder Resist, Dk 3.5

## Board outline
228.395,168.712 ccw(c223.396,168.712) 223.395,173.712 63.395,173.712 ccw(c63.395,168.712) 58.395,168.712 58.395,8.712 ccw(c63.395,8.712) 63.395,3.712 223.395,3.712 ccw(c223.395,8.712) 228.395,8.712 228.395,168.712
cut-out: 121.905,57.012 121.868,57.483 121.757,57.942 121.577,58.378 121.33,58.781 121.023,59.14 120.664,59.446 120.262,59.693 119.825,59.874 119.366,59.984 118.896,60.021 118.425,59.984 117.966,59.874 117.529,59.693 117.127,59.446 116.768,59.14 116.461,58.781 116.214,58.378 116.034,57.942 115.923,57.483 115.886,57.012 115.923,56.541 116.034,56.082 116.214,55.646 116.461,55.243 116.768,54.884 117.127,54.577 117.529,54.331 117.966,54.15 118.425,54.04 118.896,54.003 119.366,54.04 119.825,54.15 120.262,54.331 120.664,54.577 121.023,54.884 121.33,55.243 121.577,55.646 121.757,56.082 121.868,56.541 121.905,57.012
cut-out: 225.537,10.062 225.498,10.46 225.382,10.843 225.193,11.196 224.939,11.506 224.63,11.76 224.277,11.948 223.894,12.064 223.495,12.104 223.097,12.064 222.714,11.948 222.361,11.76 222.052,11.506 221.798,11.196 221.609,10.843 221.493,10.46 221.454,10.062 221.493,9.664 221.609,9.281 221.798,8.928 222.052,8.618 222.361,8.364 222.714,8.175 223.097,8.059 223.495,8.02 223.894,8.059 224.277,8.175 224.63,8.364 224.939,8.618 225.193,8.928 225.382,9.281 225.498,9.664 225.537,10.062
cut-out: 121.905,147.012 121.868,147.483 121.757,147.942 121.577,148.378 121.33,148.781 121.023,149.14 120.664,149.446 120.262,149.693 119.825,149.874 119.366,149.984 118.896,150.021 118.425,149.984 117.966,149.874 117.529,149.693 117.127,149.446 116.768,149.14 116.461,148.781 116.214,148.378 116.034,147.942 115.923,147.483 115.886,147.012 115.923,146.541 116.034,146.082 116.214,145.646 116.461,145.243 116.768,144.884 117.127,144.577 117.529,144.331 117.966,144.15 118.425,144.04 118.896,144.003 119.366,144.04 119.825,144.15 120.262,144.331 120.664,144.577 121.023,144.884 121.33,145.243 121.577,145.646 121.757,146.082 121.868,146.541 121.905,147.012
cut-out: 70.597,10.062 70.558,10.46 70.442,10.843 70.253,11.196 69.999,11.506 69.69,11.76 69.337,11.948 68.954,12.064 68.555,12.104 68.157,12.064 67.774,11.948 67.421,11.76 67.112,11.506 66.858,11.196 66.669,10.843 66.553,10.46 66.514,10.062 66.553,9.664 66.669,9.281 66.858,8.928 67.112,8.618 67.421,8.364 67.774,8.175 68.157,8.059 68.555,8.02 68.954,8.059 69.337,8.175 69.69,8.364 69.999,8.618 70.253,8.928 70.442,9.281 70.558,9.664 70.597,10.062
cut-out: 93.457,167.542 93.418,167.94 93.302,168.323 93.113,168.676 92.859,168.986 92.55,169.24 92.197,169.428 91.814,169.544 91.415,169.584 91.017,169.544 90.634,169.428 90.281,169.24 89.972,168.986 89.718,168.676 89.529,168.323 89.413,167.94 89.374,167.542 89.413,167.144 89.529,166.761 89.718,166.408 89.972,166.098 90.281,165.844 90.634,165.655 91.017,165.539 91.415,165.5 91.814,165.539 92.197,165.655 92.55,165.844 92.859,166.098 93.113,166.408 93.302,166.761 93.418,167.144 93.457,167.542
cut-out: 175.905,147.012 175.868,147.483 175.757,147.942 175.577,148.378 175.33,148.781 175.023,149.14 174.664,149.446 174.262,149.693 173.825,149.874 173.366,149.984 172.895,150.021 172.425,149.984 171.966,149.874 171.529,149.693 171.127,149.446 170.768,149.14 170.461,148.781 170.214,148.378 170.034,147.942 169.923,147.483 169.886,147.012 169.923,146.541 170.034,146.082 170.214,145.646 170.461,145.243 170.768,144.884 171.127,144.577 171.529,144.331 171.966,144.15 172.425,144.04 172.895,144.003 173.366,144.04 173.825,144.15 174.262,144.331 174.664,144.577 175.023,144.884 175.33,145.243 175.577,145.646 175.757,146.082 175.868,146.541 175.905,147.012
cut-out: 225.537,167.542 225.498,167.94 225.382,168.323 225.193,168.676 224.939,168.986 224.63,169.24 224.277,169.428 223.894,169.544 223.495,169.584 223.097,169.544 222.714,169.428 222.361,169.24 222.052,168.986 221.798,168.676 221.609,168.323 221.493,167.94 221.454,167.542 221.493,167.144 221.609,166.761 221.798,166.408 222.052,166.098 222.361,165.844 222.714,165.655 223.097,165.539 223.495,165.5 223.894,165.539 224.277,165.655 224.63,165.844 224.939,166.098 225.193,166.408 225.382,166.761 225.498,167.144 225.537,167.542
cut-out: 175.905,57.012 175.868,57.483 175.757,57.942 175.577,58.378 175.33,58.781 175.023,59.14 174.664,59.446 174.262,59.693 173.825,59.874 173.366,59.984 172.895,60.021 172.425,59.984 171.966,59.874 171.529,59.693 171.127,59.446 170.768,59.14 170.461,58.781 170.214,58.378 170.034,57.942 169.923,57.483 169.886,57.012 169.923,56.541 170.034,56.082 170.214,55.646 170.461,55.243 170.768,54.884 171.127,54.577 171.529,54.331 171.966,54.15 172.425,54.04 172.895,54.003 173.366,54.04 173.825,54.15 174.262,54.331 174.664,54.577 175.023,54.884 175.33,55.243 175.577,55.646 175.757,56.082 175.868,56.541 175.905,57.012
cut-out: 5.75,228.49 5.75,226.79 5.759,226.79 5.724,226.614 5.624,226.466 5.476,226.366 5.3,226.331 5.124,226.366 4.976,226.466 4.876,226.614 4.841,226.79 4.85,226.79 4.85,228.49 4.841,228.49 4.876,228.666 4.976,228.814 5.124,228.914 5.3,228.949 5.476,228.914 5.624,228.814 5.724,228.666 5.759,228.49 5.75,228.49
cut-out: 72.953,115.192 73.034,115.314 73.07,115.494 73.034,115.674 72.932,115.826 72.902,115.847 72.78,115.928 72.6,115.964 72.42,115.928 72.268,115.826 72.247,115.796 72.166,115.674 72.13,115.494 72.166,115.314 72.268,115.162 72.298,115.142 72.42,115.06 72.6,115.024 72.78,115.06 72.932,115.162 72.953,115.192
cut-out: 58.453,115.203 58.534,115.325 58.57,115.505 58.534,115.685 58.432,115.837 58.402,115.858 58.28,115.939 58.1,115.975 57.92,115.939 57.768,115.837 57.747,115.807 57.666,115.685 57.63,115.505 57.666,115.325 57.768,115.173 57.798,115.152 57.92,115.071 58.1,115.035 58.28,115.071 58.432,115.173 58.453,115.203

## Design rules (kind name [scope] priority, off if disabled: settings)
Clearance [All] p1: gap=0.08 ignorepadtopadclearanceinfootprint=FALSE
HoleToHoleClearance [All] p1: gap=0.1 allowstackedmicrovias=TRUE
MinimumSolderMaskSliver [All] p1: minsoldermaskwidth=0
PlaneClearance [All] p1: clearance=0.508
PlaneConnect [All] p1: planeconnectstyle=Relief reliefexpansion=0.508 reliefentries=4 reliefconductorwidth=0.254 reliefairgap=0.254
PolygonConnect [All] p1: connectstyle=Direct reliefconductorwidth=0.254 reliefentries=4 polygonreliefangle="90 Angle" airgapwidth=0.254
RoutingVias [All] p1: holewidth=0.3 width=0.4 viastyle="Through Hole" minholewidth=0.25 minwidth=0.3 maxholewidth=0.711 maxwidth=1.27
SilkToSilkClearance [All] p1: silktosilkclearance=0
SilkToSolderMaskClearance [IsPad] p1: minsilkscreentomaskgap=0 clearancetoexposedcopper=TRUE
SolderMaskExpansion [All] p1: expansion=0.102 istentingtop=FALSE
Width [All] p1: maxlimit=0.3 minlimit=0.08 preferedwidth=0.15 checkconnectedcopper=TRUE
24 further rules are at their usual default settings.

## Components (designator, comment, footprint, x,y, rotation, side; value= is the part's Value field where it differs from the comment)
C1 "Comment" C_0402_1005Metric#1 72,65.09 r0 top value=DNP
C2 "Comment" C_0402_1005Metric#1 204.244,92.456 r0 top value=150nF
C3 "Comment" C_0402_1005Metric#1 156,144.09 r0 top value=100nF
C4 "Comment" C_0402_1005Metric#1 71,67.09 r0 top value=1nF
C5 "Comment" C_0402_1005Metric#2 161,45.09 r0 bottom value=150nF
C6 "Comment" C_0402_1005Metric#2 62,86.09 r0 bottom value=DNP
C7 "Comment" C_0402_1005Metric#1 208,14.09 r0 top value=100nF
C8 "Comment" C_0402_1005Metric#2 65,136.09 r0 bottom value=150nF
C9 "Comment" C_1206_3216Metric#1 188,111.09 r0 bottom value=10uF
C10 "Comment" C_1206_3216Metric#1 170,20.09 r0 bottom value=DNP
C11 "Comment" C_0603_1608Metric#1 156,125.09 r0 bottom value=270nF
C12 "Comment" C_0603_1608Metric#1 152,77.09 r0 bottom value=250nF
C13 "Comment" C_0603_1608Metric#1 178,56.09 r0 bottom value=270nF
C14 "Comment" C_1206_3216Metric#1 187,108.09 r0 bottom value=10uF
C15 "Comment" C_0402_1005Metric#2 170.533,12.065 r0 bottom value=1nF
C16 "Comment" C_0402_1005Metric#2 66,106.09 r0 bottom value=100pF
C17 "Comment" C_0402_1005Metric#2 111,104.09 r0 bottom value=150nF
C18 "Comment" C_0603_1608Metric#1 159,71.09 r0 bottom value=270nF
C19 "Comment" C_0402_1005Metric#2 107,82.09 r0 bottom value=150nF
C20 "Comment" C_0402_1005Metric#2 184,74.09 r0 bottom value=1.5nF
C21 "Comment" C_0603_1608Metric#1 180,73.09 r0 bottom value=270nF
C22 "Comment" C_0603_1608Metric#1 173.863,82.55 r0 bottom value=270nF
C23 "Comment" C_1206_3216Metric#1 175,20.09 r0 bottom value=10uF
C24 "Comment" C_0402_1005Metric#2 151,79.09 r0 bottom value=DNP
C25 "Comment" C_0603_1608Metric#1 200,84.09 r0 bottom value=270nF
C26 "Comment" C_0402_1005Metric#2 108,29.09 r0 bottom value=150nF
C27 "Comment" C_0402_1005Metric#2 126,151.09 r0 bottom value=18pF
C28 "Comment" C_0402_1005Metric#2 126,153.09 r0 bottom value=18pF
C29 "Comment" C_0402_1005Metric#2 189,169.09 r0 bottom value=120nF
C30 "Comment" C_1206_3216Metric#1 112,56.09 r0 bottom value=10uF
C31 "Comment" C_0402_1005Metric#2 197,46.09 r0 bottom value=150nF
C32 "Comment" C_0402_1005Metric#2 87,29.09 r0 bottom value=150nF
C33 "Comment" C_0402_1005Metric#2 87,78.09 r0 bottom value=150nF
C34 "Comment" C_0402_1005Metric#2 93,121.09 r0 bottom value=1nF
C35 "Comment" C_0402_1005Metric#2 78,76.09 r0 bottom value=150nF
C36 "Comment" C_1206_3216Metric#1 112,59.09 r0 bottom value=10uF
C37 "Comment" C_0402_1005Metric#2 97,59.09 r0 bottom value=1nF
C38 "Comment" C_0402_1005Metric#2 82,45.09 r0 bottom value=1nF
C39 "Comment" C_0402_1005Metric#2 74,146.09 r0 bottom value=150nF
C40 "Comment" C_0402_1005Metric#2 111,106.09 r0 bottom value=1nF
C41 "Comment" C_0402_1005Metric#2 82,43.09 r0 bottom value=120nF
C42 "Comment" C_0402_1005Metric#2 201,38.09 r0 bottom value=150nF
C43 "Comment" C_0402_1005Metric#2 74,144.09 r0 bottom value=1nF
C44 "Comment" C_0402_1005Metric#2 162,125.09 r0 bottom value=5.6nF
C45 "Comment" C_0603_1608Metric#1 113,46.09 r0 bottom value=270nF
C46 "Comment" C_0603_1608Metric#1 218,110.09 r0 bottom value=10nF
C47 "Comment" C_1206_3216Metric#1 217.59,153.745 r270 bottom value=5.6uF
C48 "Comment" C_0402_1005Metric#2 110,53.09 r0 bottom value=330nF
C49 "Comment" C_0805_2012Metric 72,81.09 r0 bottom value=2.2uF
C50 "Comment" C_0402_1005Metric#2 157,127.09 r0 bottom value=DNP
C51 "Comment" C_1206_3216Metric#1 201.635,154.05 r0 bottom value=10uF
C52 "Comment" C_0402_1005Metric#2 169,61.09 r0 bottom value=22pF
C53 "Comment" C_0402_1005Metric#2 148,66.09 r0 bottom value=22pF
C54 "Comment" C_0805_2012Metric 75,84.09 r0 bottom value=2.7uF
C55 "Comment" C_0402_1005Metric#2 186,140.09 r0 bottom value=100nF
C56 "Comment" C_0402_1005Metric#2 194,55.09 r0 bottom value=100nF
C57 "Comment" C_0603_1608Metric#1 188,116.09 r0 bottom value=100nF
C58 "Comment" C_0402_1005Metric#2 224,127.09 r0 bottom value=100nF
C59 "Comment" C_0603_1608Metric#2 193,50.09 r0 top value=10nF
C60 "Comment" C_0603_1608Metric#1 169,131.09 r0 bottom value=100nF
C61 "Comment" C_0402_1005Metric#2 107,66.09 r0 bottom value=180nF
C62 "Comment" C_0402_1005Metric#2 190,137.09 r0 bottom value=120nF
C63 "Comment" C_0603_1608Metric#1 108,130.09 r0 bottom value=100nF
C64 "Comment" C_0402_1005Metric#2 109,140.09 r0 bottom value=1nF
C65 "Comment" C_0402_1005Metric#2 145,137.09 r0 bottom value=150nF
C66 "Comment" C_0603_1608Metric#1 175,161.09 r0 bottom value=1uF
C67 "Comment" C_0402_1005Metric#2 144,145.09 r0 bottom value=100nF
C68 "Comment" C_0402_1005Metric#2 156,144.09 r0 bottom value=100nF
C69 "Comment" C_0402_1005Metric#2 71,150.09 r0 bottom value=1nF
C70 "Comment" C_0402_1005Metric#2 104,87.09 r0 bottom value=100nF
C71 "Comment" C_0402_1005Metric#2 82,119.09 r0 bottom value=1nF
C72 "Comment" C_0402_1005Metric#2 97,77.09 r0 bottom value=100nF
C73 "Comment" C_0402_1005Metric#2 203,26.09 r0 bottom value=120nF
C74 "Comment" C_0402_1005Metric#2 101,59.09 r0 bottom value=180nF
C75 "Comment" C_0402_1005Metric#2 71,146.09 r0 bottom value=100nF
C76 "Comment" C_0402_1005Metric#2 78,95.09 r0 bottom value=100nF
C77 "Comment" C_0402_1005Metric#2 97,90.09 r0 bottom value=1nF
C78 "Comment" C_0402_1005Metric#2 187,93.09 r0 bottom value=1nF
C79 "Comment" C_0603_1608Metric#2 77,95.09 r0 top value=1uF
C80 "Comment" C_0603_1608Metric#2 104,87.09 r0 top value=1uF
C81 "Comment" C_0402_1005Metric#2 77,113.09 r0 bottom value=1nF
C82 "Comment" C_0402_1005Metric#2 100,89.09 r0 bottom value=100nF
C83 "Comment" C_0402_1005Metric#2 193,31.09 r0 bottom value=100nF
C84 "Comment" C_0402_1005Metric#2 87,80.09 r0 bottom value=100nF
C85 "Comment" C_0402_1005Metric#2 67,81.09 r0 bottom value=1nF
C86 "Comment" C_0402_1005Metric#1 103,82.09 r0 top value=180nF
C87 "Comment" C_0402_1005Metric#2 131,46.09 r0 bottom value=120nF
C88 "Comment" C_0402_1005Metric#1 109.855,63.373 r0 top value=180nF
C89 "Comment" C_0603_1608Metric#2 120,35.09 r0 top value=470nF
C90 "Comment" C_0402_1005Metric#1 176,70.09 r0 top value=120nF
C91 "Comment" C_0402_1005Metric#1 179,70.09 r0 top value=100nF
C92 "Comment" C_0402_1005Metric#1 75,56.09 r0 top value=120nF
C93 "Comment" C_0402_1005Metric#1 61.91,53.94 r90 top value=100nF
C94 "Comment" C_0402_1005Metric#2 187,135.09 r0 bottom value=100nF
C95 "Comment" C_0402_1005Metric#1 109,143.09 r0 top value=150nF
C96 "Comment" C_0402_1005Metric#2 186,164.09 r0 bottom value=150nF
C97 "Comment" C_0402_1005Metric#2 153,137.09 r0 bottom value=100nF
C98 "Comment" C_0402_1005Metric#2 180,159.09 r0 bottom value=330pF
C99 "Comment" C_0402_1005Metric#2 131,144.09 r0 bottom value=100pF
C100 "Comment" C_0603_1608Metric#1 157,138.09 r0 bottom value=10nF
C101 "Comment" C_0402_1005Metric#1 201,68.09 r0 top value=180nF
C102 "Comment" C_0402_1005Metric#1 225,125.09 r0 top value=120nF
C103 "Comment" C_0402_1005Metric#1 203,95.09 r0 top value=150nF
C104 "Comment" C_0402_1005Metric#1 204,70.09 r0 top value=150nF
C105 "Comment" C_0402_1005Metric#1 201,70.09 r0 top value=150nF
C106 "Comment" C_0402_1005Metric#1 225,127.09 r0 top value=1nF
C107 "Comment" C_0402_1005Metric#1 191.135,104.267 r0 top value=1nF
C108 "Comment" C_0402_1005Metric#2 109,142.09 r0 bottom value=150nF
C109 "Comment" C_0402_1005Metric#2 74,149.09 r0 bottom value=180nF
C110 "Comment" C_0402_1005Metric#2 110,121.09 r0 bottom value=1nF
C111 "Comment" C_0402_1005Metric#2 201,72.09 r0 bottom value=1nF
C112 "Comment" C_0402_1005Metric#1 204,38.09 r0 top value=150nF
C113 "Comment" C_0402_1005Metric#2 110,119.09 r0 bottom value=120nF
C114 "Comment" C_0402_1005Metric#2 132,39.09 r0 bottom value=100nF
C115 "Comment" C_0402_1005Metric#2 186,72.09 r0 bottom value=100nF
C116 "Comment" C_0402_1005Metric#2 149,26.09 r0 bottom value=100nF
C117 "Comment" C_0402_1005Metric#2 82,121.09 r0 bottom value=100nF
C118 "Comment" C_0805_2012Metric 135,160.09 r0 bottom value=2.7uF
C119 "Comment" C_0402_1005Metric#2 142,24.09 r0 bottom value=100nF
C120 "Comment" C_0402_1005Metric#2 87,82.09 r0 bottom value=100nF
C121 "Comment" C_0402_1005Metric#2 109,144.09 r0 bottom value=100nF
C122 "Comment" C_0402_1005Metric#2 74,151.09 r0 bottom value=100nF
C123 "Comment" C_0402_1005Metric#2 74,153.09 r0 bottom value=150nF
C124 "Comment" C_0603_1608Metric#1 141,53.09 r0 bottom value=150nF
C125 "Comment" C_0402_1005Metric#2 210,41.09 r0 bottom value=1nF
C126 "Comment" C_0402_1005Metric#2 131,44.09 r0 bottom value=150nF
C127 "Comment" C_0402_1005Metric#2 94,59.09 r0 bottom value=100nF
C128 "Comment" C_0402_1005Metric#2 201,68.09 r0 bottom value=150nF
C129 "Comment" C_0402_1005Metric#2 183,133.09 r0 bottom value=100nF
C130 "Comment" C_0603_1608Metric#1 192,34.09 r0 bottom value=1uF
C131 "Comment" C_0603_1608Metric#1 221,145.09 r0 bottom value=10nF
C132 "Comment" C_0603_1608Metric#1 212,164.09 r0 bottom value=100nF
C133 "Comment" C_0402_1005Metric#2 200,93.09 r0 bottom value=100nF
C134 "Comment" C_0603_1608Metric#1 217,164.09 r0 bottom value=150nF
C135 "Comment" C_0805_2012Metric 225,52.09 r0 bottom value=2.7uF
C136 "Comment" C_0402_1005Metric#2 224,54.09 r0 bottom value=150nF
C137 "Comment" C_0402_1005Metric#2 148,157.09 r0 bottom value=1nF
C138 "Comment" C_0402_1005Metric#2 135,155.09 r0 bottom value=1nF
C139 "Comment" C_0402_1005Metric#2 131,159.09 r0 bottom value=100nF
C140 "Comment" C_0603_1608Metric#1 205,38.09 r0 bottom value=1uF
C141 "Comment" C_0402_1005Metric#2 217,144.09 r0 bottom value=100nF
C142 "Comment" C_0402_1005Metric#2 209,146.09 r0 bottom value=150nF
C143 "Comment" C_0402_1005Metric#2 203,146.09 r0 bottom value=150nF
C144 "Comment" C_0402_1005Metric#2 212,145.09 r0 bottom value=100pF
C145 "Comment" C_0402_1005Metric#2 215,146.09 r0 bottom value=100pF
C146 "Comment" C_0402_1005Metric#2 206,146.09 r0 bottom value=100nF
C147 "Comment" C_0603_1608Metric#1 174,17.09 r0 bottom value=1uF
C148 "Comment" C_0402_1005Metric#2 67,91.09 r0 bottom value=DNP
C149 "Comment" C_0402_1005Metric#2 189,114.09 r0 bottom value=100nF
C150 "Comment" C_0603_1608Metric#1 153,74.09 r0 bottom value=10nF
C151 "Comment" C_0402_1005Metric#2 192,114.09 r0 bottom value=150nF
C152 "Comment" C_1206_3216Metric#1 176,80.09 r0 bottom value=10uF
C153 "Comment" C_0603_1608Metric#1 66,134.09 r0 bottom value=1uF
C154 "Comment" C_0402_1005Metric#2 169,22.09 r0 bottom value=100pF
C155 "Comment" C_0402_1005Metric#2 173.736,84.455 r0 bottom value=150nF
C156 "Comment" C_0402_1005Metric#2 90,121.09 r0 bottom value=100nF
C157 "Comment" C_0402_1005Metric#2 171,123.09 r0 bottom value=150nF
C158 "Comment" C_0603_1608Metric#1 162.814,6.477 r0 bottom value=1uF
C159 "Comment" C_0402_1005Metric#2 62,105.09 r0 bottom value=DNP
C160 "Comment" C_1206_3216Metric#1 181,76.09 r0 bottom value=10uF
C161 "Comment" C_1206_3216Metric#1 171,80.09 r0 bottom value=10uF
C162 "Comment" C_1206_3216Metric#1 117.602,24.257 r0 bottom value=10uF
C163 "Comment" C_0402_1005Metric#1 211,17.09 r0 top value=220pF
C164 "Comment" C_0603_1608Metric#1 78,142.09 r0 bottom value=330nF
C165 "Comment" C_0402_1005Metric#2 82,41.09 r0 bottom value=DNP
C166 "Comment" C_0603_1608Metric#1 186,76.09 r0 bottom value=300nF
C167 "Comment" C_0402_1005Metric#1 211,15.09 r0 top value=220pF
C168 "Comment" C_0603_1608Metric#2 72,120.09 r0 top value=1uF
C169 "Comment" C_0402_1005Metric#2 76,37.09 r0 bottom value=56pF
C170 "Comment" C_0402_1005Metric#1 205,13.09 r0 top value=220pF
C171 "Comment" C_0402_1005Metric#2 66,22.09 r0 bottom value=56pF
C172 "Comment" C_0402_1005Metric#2 96,121.09 r0 bottom value=100nF
C173 "Comment" C_0402_1005Metric#2 63,23.09 r0 bottom value=56pF
C174 "Comment" C_0402_1005Metric#2 77,35.09 r0 bottom value=56pF
C175 "Comment" C_0402_1005Metric#2 64,31.09 r0 bottom value=56pF
C176 "Comment" C_0603_1608Metric#1 67,33.09 r0 bottom value=470nF
C177 "Comment" C_0402_1005Metric#2 66,35.09 r0 bottom value=56pF
C178 "Comment" C_0402_1005Metric#2 81,37.09 r0 bottom value=56pF
C179 "Comment" C_0402_1005Metric#2 73,17.09 r0 bottom value=1nF
C180 "Comment" C_0402_1005Metric#2 83,31.09 r0 bottom value=56pF
C181 "Comment" C_0402_1005Metric#2 65,26.09 r0 bottom value=56pF
C182 "Comment" C_0402_1005Metric#2 64,29.09 r0 bottom value=56pF
C183 "Comment" C_0402_1005Metric#2 69,24.09 r0 bottom value=56pF
C184 "Comment" C_0402_1005Metric#2 73,26.09 r0 bottom value=56pF
C185 "Comment" C_0402_1005Metric#2 66,24.09 r0 bottom value=56pF
C186 "Comment" C_0402_1005Metric#2 77,33.09 r0 bottom value=56pF
C187 "Comment" C_0402_1005Metric#2 67,31.09 r0 bottom value=56pF
C188 "Comment" C_0402_1005Metric#2 69,20.09 r0 bottom value=1nF
C189 "Comment" C_0402_1005Metric#2 68,18.09 r0 bottom value=100nF
C190 "Comment" C_0603_1608Metric#1 73,19.09 r0 bottom value=10nF
C191 "Comment" C_0402_1005Metric#2 76,39.09 r0 bottom value=56pF
C192 "Comment" C_0402_1005Metric#2 63,33.09 r0 bottom value=56pF
C193 "Comment" C_0402_1005Metric#2 72,22.09 r0 bottom value=56pF
C194 "Comment" C_0402_1005Metric#2 66,20.09 r0 bottom value=56pF
C195 "Comment" C_0402_1005Metric#2 72,24.09 r0 bottom value=56pF
C196 "Comment" C_0402_1005Metric#2 81,39.09 r0 bottom value=56pF
C197 "Comment" C_0603_1608Metric#2 71,123.09 r0 top value=300nF
C198 "Comment" C_0402_1005Metric#1 205,15.09 r0 top value=120nF
C199 "Comment" C_0402_1005Metric#1 214,15.09 r0 top value=220pF
C200 "Comment" C_1206_3216Metric#2 67,53.09 r0 top value=10uF
C201 "Comment" C_1206_3216Metric#2 71,117.09 r0 top value=10uF
C202 "Comment" C_0603_1608Metric#2 76,117.09 r0 top value=150nF
C203 "Comment" C_0402_1005Metric#2 204,89.09 r0 bottom value=150nF
C204 "Comment" C_1206_3216Metric#1 78,55.09 r0 bottom value=10uF
C205 "Comment" C_0402_1005Metric#2 204,85.09 r0 bottom value=150nF
C206 "Comment" C_1206_3216Metric#1 114,53.09 r0 bottom value=10uF
C207 "Comment" C_0603_1608Metric#1 146,56.09 r0 bottom value=300nF
C208 "Comment" C_0402_1005Metric#2 203,93.09 r0 bottom value=1nF
C209 "Comment" C_1206_3216Metric#1 175,123.09 r0 bottom value=10uF
C210 "Comment" C_1206_3216Metric#1 114,50.09 r0 bottom value=10uF
C211 "Comment" C_0402_1005Metric#2 204,91.09 r0 bottom value=150nF
C212 "Comment" C_0402_1005Metric#2 204,75.09 r0 bottom value=150nF
C213 "Comment" C_0402_1005Metric#2 179,125.09 r0 bottom value=100nF
C214 "Comment" C_1206_3216Metric#1 169,128.09 r0 bottom value=10uF
C215 "Comment" C_0402_1005Metric#2 204,73.09 r0 bottom value=100nF
C216 "Comment" C_0402_1005Metric#2 144,153.09 r0 bottom value=150nF
C217 "Comment" C_0402_1005Metric#2 107,68.09 r0 bottom value=150nF
C218 "Comment" C_0603_1608Metric#1 176,158.09 r0 bottom value=150nF
C219 "Comment" C_0402_1005Metric#2 109,146.09 r0 bottom value=150nF
C220 "Comment" C_0402_1005Metric#2 144,147.09 r0 bottom value=150nF
C221 "Comment" C_0603_1608Metric#1 132,60.09 r0 bottom value=150nF
C222 "Comment" C_0603_1608Metric#1 186,166.09 r0 bottom value=10nF
C223 "Comment" C_0402_1005Metric#2 147,153.09 r0 bottom value=150nF
C224 "Comment" C_0603_1608Metric#1 89,130.09 r0 bottom value=10nF
C225 "Comment" C_0603_1608Metric#1 191,167.09 r0 bottom value=1uF
C226 "Comment" C_0603_1608Metric#1 112,68.09 r0 bottom value=1uF
C227 "Comment" C_0402_1005Metric#2 208,62.09 r0 bottom value=150nF
C228 "Comment" C_0402_1005Metric#1 176.37,170.49 r180 top value=100pF
C229 "Comment" C_0603_1608Metric#1 184,161.09 r0 bottom value=1uF
C230 "Comment" C_0402_1005Metric#2 199,59.09 r0 bottom value=DNP
C231 "Comment" C_0402_1005Metric#2 144,149.09 r0 bottom value=150nF
C232 "Comment" C_1206_3216Metric#1 204,51.09 r0 bottom value=10uF
C233 "Comment" C_0603_1608Metric#1 135,152.09 r0 bottom value=330nF
C234 "Comment" C_0402_1005Metric#2 126,148.09 r0 bottom value=150nF
C235 "Comment" C_0402_1005Metric#1 156,142.09 r0 top value=150nF
C236 "Comment" C_0402_1005Metric#2 200,91.09 r0 bottom value=100nF
C237 "Comment" C_0402_1005Metric#1 207.645,93.853 r0 top value=150nF
C238 "Comment" C_0603_1608Metric#2 61.85,48.25 r90 top value=1uF
C239 "Comment" C_0402_1005Metric#1 62.03,59.44 r90 top value=150nF
C240 "Comment" C_0603_1608Metric#2 203,101.09 r0 top value=300nF
C241 "Comment" C_0402_1005Metric#2 209,122.09 r0 bottom value=100nF
C242 "Comment" C_0402_1005Metric#2 96,87.09 r0 bottom value=100nF
C243 "Comment" C_0402_1005Metric#1 179,68.09 r0 top value=120nF
C244 "Comment" C_0402_1005Metric#2 84,82.09 r0 bottom value=120nF
C245 "Comment" C_0603_1608Metric#1 214,122.09 r0 bottom value=10nF
C246 "Comment" C_0603_1608Metric#1 157,77.09 r0 bottom value=150nF
C247 "Comment" C_0402_1005Metric#2 91,59.09 r0 bottom value=1nF
C248 "Comment" C_0603_1608Metric#1 78,87.09 r0 bottom value=1uF
C249 "Comment" C_0402_1005Metric#2 81,114.09 r0 bottom value=150nF
C250 "Comment" C_0402_1005Metric#2 76,92.09 r0 bottom value=18pF
C251 "Comment" C_0402_1005Metric#2 79,91.09 r0 bottom value=18pF
C252 "Comment" C_0402_1005Metric#2 78,53.09 r0 bottom value=1nF
C253 "Comment" C_0402_1005Metric#2 194,49.09 r0 bottom value=150nF
C254 "Comment" C_0402_1005Metric#2 113,119.09 r0 bottom value=1nF
C255 "Comment" C_0402_1005Metric#2 74,142.09 r0 bottom value=120nF
C256 "Comment" C_0402_1005Metric#2 222,89.09 r0 bottom value=150nF
C257 "Comment" C_0402_1005Metric#2 205,60.09 r0 bottom value=DNP
C258 "Comment" C_0402_1005Metric#2 205,62.09 r0 bottom value=220pF
C259 "Comment" C_0603_1608Metric#2 201,49.09 r0 top value=330nF
C260 "Comment" C_0402_1005Metric#2 202,53.09 r0 bottom value=1nF
C261 "Comment" C_0402_1005Metric#2 202,59.09 r0 bottom value=DNP
C262 "Comment" C_0805_2012Metric 209,124.09 r0 bottom value=1.5uF
C263 "Comment" C_0402_1005Metric#2 188,130.09 r0 bottom value=100nF
C264 "Comment" C_0402_1005Metric#2 207,77.09 r0 bottom value=56pF
C265 "Comment" C_0402_1005Metric#1 176,68.09 r0 top value=150nF
C266 "Comment" C_0402_1005Metric#2 224,152.09 r0 bottom value=180pF
C267 "Comment" C_0402_1005Metric#2 94,90.09 r0 bottom value=DNP
C268 "Comment" C_0402_1005Metric#2 216.662,71.755 r0 bottom value=56pf
C269 "Comment" C_0402_1005Metric#2 224,148.09 r0 bottom value=220pF
C270 "Comment" C_0402_1005Metric#2 125,79.09 r0 bottom value=DNP
C271 "Comment" C_0402_1005Metric#2 187,128.09 r0 bottom value=150nF
C272 "Comment" C_0402_1005Metric#2 184,135.09 r0 bottom value=150nF
C273 "Comment" C_0603_1608Metric#1 124,53.09 r0 bottom value=150nF
C274 "Comment" C_0402_1005Metric#2 204,71.09 r0 bottom value=100nF
C275 "Comment" C_0402_1005Metric#2 201,70.09 r0 bottom value=100nF
C276 "Comment" C_0402_1005Metric#2 82,80.09 r0 bottom value=100nF
C277 "Comment" C_0603_1608Metric#1 144,66.09 r0 bottom value=1uF
C278 "Comment" C_0402_1005Metric#2 161,32.09 r0 bottom value=150nF
C279 "Comment" C_0402_1005Metric#2 149,24.09 r0 bottom value=120nF
C280 "Comment" C_0402_1005Metric#2 74,140.09 r0 bottom value=100nF
C281 "Comment" C_0402_1005Metric#2 208,60.09 r0 bottom value=39pF
C282 "Comment" C_0402_1005Metric#2 81,112.09 r0 bottom value=150nF
C283 "Comment" C_0402_1005Metric#2 208,52.09 r0 bottom value=39pF
D1 "Comment" 3D#1 74,71.09 r0 top value=3D
D2 "Comment" SOT-416L#1 107,150.09 r0 bottom value=K
D3 "Comment" 3D#2 179,87.09 r0 bottom value=3D
D4 "Comment" SOT-416L#1 157,159.09 r0 bottom value=N
D5 "Comment" 3D#2 204,78.09 r0 bottom value=3D
D6 "Comment" 3D#2 182,154.09 r0 bottom value=Q
D7 "Comment" 3D#1 222.827,151.19 r0 top value=Q
D8 "Comment" 3D#1 225.03,130.635 r0 top value=DNP
D9 "Comment" 3D#1 193,53.09 r0 top value=DNP
D10 "Comment" SOT-416L#1 114,97.09 r0 bottom value=K
D11 "Comment" 3D#2 189,141.09 r0 bottom value=DNP
D12 "Comment" 3D#2 181,117.09 r0 bottom value=DNP
D13 "Comment" SOT-416L#1 111,82.09 r0 bottom value=K
D14 "Comment" SOT-416L#1 166,25.09 r0 bottom value=N
D15 "Comment" SOT-416L#1 163,25.09 r0 bottom value=N
D16 "Comment" 3D#2 198.247,64.897 r0 bottom value=3D
D17 "Comment" SOT-416L#1 211.201,71.882 r0 bottom value=N
D18 "Comment" 3D#2 102,74.09 r0 bottom value=3D
D19 "Comment" SOT-416L#1 162,42.09 r0 bottom value=N
D20 "Comment" SOT-416L#1 157,64.09 r0 bottom value=3D
D21 "Comment" 3D#1 108,86.09 r0 top value=3D
D22 "Comment" 3D#2 182,55.09 r0 bottom value=3D
D23 "Comment" D_0603_1608Metric#1 112,85.09 r0 top value=92
D24 "Comment" 3D#2 85,84.09 r0 bottom value=3D
D25 "Comment" 3D#2 88,84.09 r0 bottom value=3D
D26 "Comment" 3D#2 183,28.09 r0 bottom value=3D
D27 "Comment" 3D#2 199,32.09 r0 bottom value=3D
D28 "Comment" 3D#2 186,27.09 r0 bottom value=3D
D29 "Comment" 3D#2 196,32.09 r0 bottom value=3D
D30 "Comment" SOT-416L#1 199,29.09 r0 bottom value=N
D31 "Comment" SOT-416L#1 202,32.09 r0 bottom value=N
D32 "Comment" SOT-416L#1 209,65.09 r0 bottom value=K
D33 "Comment" SOT-416#1 189,39.09 r0 bottom value=N
D34 "Comment" 3D#2 156,141.09 r0 bottom value=DNP
D35 "Comment" 3D#2 221,52.09 r0 bottom value=3D
D36 "Comment" D_0603_1608Metric#2 145,151.09 r0 bottom value=71
D37 "Comment" SOT-416L#1 163,164.09 r0 bottom value=N
D38 "Comment" D_0603_1608Metric#2 104,139.09 r0 bottom value=40
D39 "Comment" Diode 85,148.09 r0 top value="s.3 5F"
D40 "Comment" SOT-416L#1 74,87.09 r0 bottom value=N
D41 "Comment" D_0603_1608Metric#2 214,41.09 r0 bottom value=24
D42 "Comment" SOT-416L#1 82,153.09 r0 bottom value=N
D43 "Comment" SOT-416L#1 85,153.09 r0 bottom value=N
D44 "Comment" D_0603_1608Metric#2 196,167.09 r0 bottom value=83
D45 "Comment" SOT-416L#1 192.45,170.335 r0 bottom value=N
D46 "Comment" SOT-416L#1 189,163.09 r0 bottom value=N
D47 "Comment" D_0603_1608Metric#2 95,127.09 r0 bottom value=24
D48 "Comment" D_0603_1608Metric#2 196,170.09 r0 bottom value=A2
D49 "Comment" SOT-416L#1 192,164.09 r0 bottom value=N
D50 "Comment" D_0603_1608Metric#2 196,164.09 r0 bottom value=26
D51 "Comment" D_0603_1608Metric#2 193,160.09 r0 bottom value=C6
D52 "Comment" SOT-416#2 79,48.09 r0 top value=K
D53 "Comment" SOT-416#2 79,54.09 r0 top value=K
D54 "Comment" SOT-416#2 73,54.09 r0 top value=K
D55 "Comment" Diode 85,145.09 r0 top value="s.3 5F"
D56 "Comment" SOT-416#2 76,54.09 r0 top value=K
D57 "Comment" SOT-416#2 72,57.09 r0 top value=K
D58 "Comment" SOT-416L#2 190,170.09 r0 top value=K
D59 "Comment" SOT-416L#2 192.6,21.355 r0 top value=3D
D60 "Comment" SOT-23#1 183,94.09 r0 bottom value=3D
EM1 "Comment" R-array#1 77,25.09 r0 bottom value=R-array
EM2 "Comment" R-array#1 72,36.09 r0 bottom value=R-array
EM3 "Comment" R-array#1 79,30.09 r0 bottom value=R-array
EM4 "Comment" R-array#1 81,34.09 r0 bottom value=R-array
EM5 "Comment" R-array#2 213,12.09 r0 top value=R-array
F1 "Comment" Fuse_1206_3216Metric#1 204,122.09 r0 bottom value=0.5A
F2 "Comment" Fuse_1206_3216Metric#2 70,60.09 r0 top value=1.0A
F3 "Comment" Fuse_1206_3216Metric#2 76,58.09 r0 top value=0.5A
F4 "Comment" Fuse_1206_3216Metric#1 187,132.09 r0 bottom value=0.5A
J1 "Comment" PS2 204.66,8.45 r180 top value=PS2
J2 "Comment" LCD_connector 68.897,27.463 r90 top value=LCD_connector
J3 "Comment" Audio-Jack 64.442,99.225 r90 top value=Audio-Jack
J4 "Comment" connector-4 63.6,134.67 r90 top value=connector-4
J5 "Comment" PSU_Connector 173.44,167.05 r0 bottom value=PSU_Connector
J6 "Comment" BridgeBatt 205.735,167.935 r0 top value=BridgeBatt
J7 "Comment" SPKR 61.087,76.2 r90 top value=SPKR
J8 "Comment" Modem-Connector 109.1,75 r90 top value=Modem-Connector
J9 "Comment" Debug-10 116.332,96.139 r0 top value=Debug-10
J10 "Comment" PCMCIA 140.879,14.129 r180 bottom value=PCMCIA
J11 "Comment" CF-card 191.558,135.273 r270 top value=CF-card
J12 "Comment" Debug-6 116.382,107.691 r0 top value=Debug-6
J13 "Comment" "Docking Port" 68.808,58.452 r270 bottom value="Docking Port"
J14 "Comment" TestPoint_Pad_D1.5mm 119.609,106.362 r0 top value=TestPoint_Pad_D1.5mm
J15 "Comment" "RAM Module" 76.478,146.793 r180 top value="RAM Module"
J16 "Comment" Flat-20 224.312,73.743 r90 top value=Flat-20
J17 "Comment" Flat-8 224.204,96.263 r90 top value=Flat-8
J18 "Comment" Flat-4 225.08,46.805 r90 top value=Flat-4
J19 "Comment" Flat-18 224.358,29.785 r90 top value=Flat-18
L1 "Comment" L_0603_1608Metric#1 193,14.09 r0 top value=1.5uH
L2 "Comment" L_0603_1608Metric#2 64,89.09 r0 bottom value=1.5uH
L3 "Comment" L_0603_1608Metric#2 112,43.09 r0 bottom value=1.5uH
L4 "Comment" L_1210_3225Metric 209.88,153.75 r0 bottom value=68uH
L5 "Comment" L_0603_1608Metric#2 67,104.09 r0 bottom value=1.5uH
L6 "Comment" L_0603_1608Metric#2 113,40.09 r0 bottom value=1.5uH
L7 "Comment" L_0603_1608Metric#2 78,42.09 r0 bottom value=1.5uH
L8 "Comment" L_0603_1608Metric#2 68,95.09 r0 bottom value=1.5uH
L9 "Comment" L_0805_2012Metric#1 68,29.09 r0 bottom value=300nH
L10 "Comment" L_0805_2012Metric#1 66,37.09 r0 bottom value=300nH
L11 "Comment" L_0603_1608Metric#2 72,32.09 r0 bottom value=1.5uH
L12 "Comment" L_0805_2012Metric#2 201,19.09 r0 top value=300nH
L13 "Comment" L_0603_1608Metric#2 63,92.09 r0 bottom value=1.5uH
L14 "Comment" L_0603_1608Metric#2 117,33.09 r0 bottom value=1.5uH
L15 "Comment" L_0603_1608Metric#2 152,39.09 r0 bottom value=1.5uH
L16 "Comment" L_0603_1608Metric#2 86,26.09 r0 bottom value=1.5uH
L17 "Comment" L_0603_1608Metric#2 73,29.09 r0 bottom value=1.5uH
L18 "Comment" L_0603_1608Metric#2 69,26.09 r0 bottom value=1.5uH
Q1 "Comment" SOT-23#2 80,83.09 r0 bottom value=IS6
Q2 "Comment" SOT-416#1 134,157.09 r0 bottom value=8C
Q3 "Comment" SOT-89-3#1 74,77.09 r0 top value="582 B74"
Q4 "Comment" SOT-416L#1 225,145.09 r0 bottom value=YQ
Q5 "Comment" SOT-416L#1 223,155.09 r0 bottom value=HQ
Q6 "Comment" SOT-416L#1 204,82.09 r0 bottom value=ST3
Q7 "Comment" SOT-416#1 179,161.09 r0 bottom value=8C
Q8 "Comment" 3D#2 195,64.09 r0 bottom value=6D
Q9 "Comment" SOT-523 165,21.09 r0 bottom value=8C
Q10 "Comment" SOT-416#1 219.19,16.24 r0 bottom value=8C
Q11 "Comment" SOT-23#2 76,70.09 r0 bottom value=IS6
Q12 "Comment" SOT-416#1 152.146,166.243 r0 bottom value=8C
Q13 "Comment" SOT-23#2 139,67.09 r0 bottom value=IS6
Q14 "Comment" SOT-416#1 88,91.09 r0 bottom value=8C
Q15 "Comment" SOT-416#1 97,92.09 r0 bottom value=8B
Q16 "Comment" TSOT-23#1 103,82.09 r0 bottom value=IS6
Q17 "Comment" 3D#2 130,155.09 r0 bottom value=6D
Q18 "Comment" SOT-416#1 215.265,67.183 r0 bottom value=8C
Q19 "Comment" SOT-416#1 124.841,30.988 r0 bottom value=8B
Q20 "Comment" TSOT-23#1 185,170.09 r0 bottom value=7C
Q21 "Comment" SOT-416#1 104,142.09 r0 bottom value=8B
Q22 "Comment" SOT-416L#1 101,146.09 r0 bottom value=YQ
Q23 "Comment" SOT-416#1 104,145.09 r0 bottom value=8B
Q24 "Comment" SOT-23#3 91,63.09 r0 top value=6D
Q25 "Comment" SOT-89-3#1 171,29.09 r0 top value="BH RT"
Q26 "Comment" SOT-416#1 94,92.09 r0 bottom value=8C
Q27 "Comment" SOT-416#1 188,36.09 r0 bottom value=8C
Q28 "Comment" SOT-416#1 210,44.09 r0 bottom value=8LR
Q29 "Comment" SOT-23#2 135,148.09 r0 bottom value=DNP
Q30 "Comment" SOT-416#1 189,171.09 r0 bottom value=8C
Q31 "Comment" SOT-23#2 193,59.09 r0 bottom value=6D
Q32 "Comment" SOT-416#2 169,43.09 r0 top value=8B
Q33 "Comment" SOT-89-3#1 67,48.09 r0 top value="BH RT"
Q34 "Comment" SOT-89-3#1 208.915,104.267 r0 top value="BH RT"
Q35 "Comment" SOT-523 92,69.09 r0 bottom value=8C
Q36 "Comment" TSOT-23#1 169,139.09 r0 bottom value=7C
Q37 "Comment" SOT-89-3#2 220,140.09 r0 bottom value="BH RT"
Q38 "Comment" SOT-416#1 143,63.09 r0 bottom value=8C
Q39 "Comment" TSOT-23#2 142,159.09 r0 bottom value=HQ
Q40 "Comment" TSOT-23#2 139,159.09 r0 bottom value=HQ
Q41 "Comment" TSOT-23#3 213.25,47.65 r0 top value=CQ
Q42 "Comment" TSOT-23#3 217.24,47.7 r0 top value=CQ
Q43 "Comment" SOT-523 186,119.09 r0 bottom value=8B
Q44 "Comment" SOT-523 108,92.09 r0 bottom value=8B
R1 "Comment" R_0402_1005Metric#1 105,29.09 r0 bottom value=470k
R2 "Comment" R_0402_1005Metric#1 113,34.09 r0 bottom value=470k
R3 "Comment" R_0402_1005Metric#1 91,86.09 r0 bottom value=131k
R4 "Comment" R_0402_1005Metric#2 71,71.09 r0 top value=4.7k
R5 "Comment" R_0402_1005Metric#1 116,30.09 r0 bottom value=470k
R6 "Comment" R_0402_1005Metric#1 112,28.09 r0 bottom value=470k
R7 "Comment" R_0402_1005Metric#1 110,32.09 r0 bottom value=470k
R8 "Comment" R_0402_1005Metric#2 73,83.09 r0 top value=300
R9 "Comment" R_0402_1005Metric#1 117,93.09 r0 bottom value=4.7k
R10 "Comment" R_0402_1005Metric#1 107,32.09 r0 bottom value=470k
R11 "Comment" R_0402_1005Metric#1 106,26.09 r0 bottom value=470k
R12 "Comment" R_0402_1005Metric#1 104,150.09 r0 bottom value=182k
R13 "Comment" R_0402_1005Metric#1 113,31.09 r0 bottom value=470k
R14 "Comment" R_0402_1005Metric#1 78,48.09 r0 bottom value=10
R15 "Comment" R_0402_1005Metric#1 113,37.09 r0 bottom value=470k
R16 "Comment" R_0402_1005Metric#1 102,18.09 r0 bottom value=0
R17 "Comment" R_0402_1005Metric#1 75,46.09 r0 bottom value=10
R18 "Comment" R_0402_1005Metric#1 93,24.09 r0 bottom value=470k
R19 "Comment" R_0402_1005Metric#1 110,37.09 r0 bottom value=470k
R20 "Comment" R_0402_1005Metric#1 78,45.09 r0 bottom value=10
R21 "Comment" R_0402_1005Metric#1 101,14.09 r0 bottom value=0
R22 "Comment" R_0402_1005Metric#1 92,18.09 r0 bottom value=470k
R23 "Comment" R_0402_1005Metric#1 160,74.09 r0 bottom value=0
R24 "Comment" R_0402_1005Metric#1 70,89.09 r0 bottom value=4.7k
R25 "Comment" R_0402_1005Metric#1 170.18,16.129 r0 bottom value=1k
R26 "Comment" R_0402_1005Metric#1 156,99.09 r0 bottom value=2.2k
R27 "Comment" R_0402_1005Metric#1 157.863,6.858 r0 bottom value=470k
R28 "Comment" R_1206_3216Metric 196.85,104.14 r0 bottom value=56
R29 "Comment" R_0402_1005Metric#1 186,69.09 r0 bottom value=1k
R30 "Comment" R_0402_1005Metric#1 68,99.09 r0 bottom value=0
R31 "Comment" R_0402_1005Metric#1 75,95.09 r0 bottom value=300
R32 "Comment" R_0402_1005Metric#1 185,19.09 r0 bottom value=2.2k
R33 "Comment" R_0402_1005Metric#1 167.767,7.874 r0 bottom value=470k
R34 "Comment" R_0402_1005Metric#1 155,93.09 r0 bottom value=1k
R35 "Comment" R_0402_1005Metric#1 182,19.09 r0 bottom value=100k
R36 "Comment" R_0402_1005Metric#1 198,98.09 r0 bottom value=10k
R37 "Comment" R_0402_1005Metric#1 158,95.09 r0 bottom value=100k
R38 "Comment" R_0402_1005Metric#1 131,162.09 r0 bottom value=4.7k
R39 "Comment" R_0402_1005Metric#1 128,159.09 r0 bottom value=47k
R40 "Comment" R_0402_1005Metric#1 127,156.09 r0 bottom value=47k
R41 "Comment" R_0402_1005Metric#1 153,154.09 r0 bottom value=10k
R42 "Comment" R_0402_1005Metric#1 152,159.09 r0 bottom value=4.7k
R43 "Comment" R_0402_1005Metric#1 145,158.09 r0 bottom value=68k
R44 "Comment" R_0402_1005Metric#1 159,163.09 r0 bottom value=100k
R45 "Comment" R_0402_1005Metric#1 223,87.09 r0 bottom value=100k
R46 "Comment" R_0402_1005Metric#1 79,63.09 r0 bottom value=33
R47 "Comment" R_0402_1005Metric#1 188,63.09 r0 bottom value=DNP
R48 "Comment" R_0402_1005Metric#1 179,94.09 r0 bottom value=DNP
R49 "Comment" R_0402_1005Metric#1 85,94.09 r0 bottom value=100k
R50 "Comment" R_0402_1005Metric#1 182,64.09 r0 bottom value=DNP
R51 "Comment" R_0402_1005Metric#1 102,28.09 r0 bottom value=0
R52 "Comment" R_0402_1005Metric#1 141,149.09 r0 bottom value=120k
R53 "Comment" R_0402_1005Metric#1 75,52.09 r0 bottom value=33
R54 "Comment" R_0402_1005Metric#1 185,65.09 r0 bottom value=DNP
R55 "Comment" R_0402_1005Metric#1 179,64.09 r0 bottom value=DNP
R56 "Comment" R_0402_1005Metric#1 179,67.09 r0 bottom value=DNP
R57 "Comment" R_0402_1005Metric#1 85,91.09 r0 bottom value=100k
R58 "Comment" R_0402_1005Metric#1 105,22.09 r0 bottom value=0
R59 "Comment" R_0402_1005Metric#1 226,87.09 r0 bottom value=100k
R60 "Comment" R_0402_1005Metric#2 62.57,68.86 r90 top value=50k
R61 "Comment" R_0402_1005Metric#1 93,21.09 r0 bottom value=470k
R62 "Comment" R_0402_1005Metric#1 150,152.09 r0 bottom value=68k
R63 "Comment" R_0402_1005Metric#1 145,161.09 r0 bottom value=68k
R64 "Comment" R_0402_1005Metric#1 188,66.09 r0 bottom value=DNP
R65 "Comment" R_0402_1005Metric#1 182,61.09 r0 bottom value=DNP
R66 "Comment" R_0402_1005Metric#1 82,58.09 r0 bottom value=270
R67 "Comment" R_0402_1005Metric#1 173,129.09 r0 bottom value=0
R68 "Comment" R_0805_2012Metric#1 202,109.09 r0 bottom value=56
R69 "Comment" R_0402_1005Metric#1 176,129.09 r0 bottom value=2.2k
R70 "Comment" R_0402_1005Metric#1 166,60.09 r0 bottom value=DNP
R71 "Comment" R_0402_1005Metric#1 190,69.09 r0 bottom value=10k
R72 "Comment" R_0402_1005Metric#1 165,131.09 r0 bottom value=0
R73 "Comment" R_0402_1005Metric#1 181,127.09 r0 bottom value=2.2k
R74 "Comment" R_0402_1005Metric#1 193,83.09 r0 bottom value=10k
R75 "Comment" R_0402_1005Metric#1 165,128.09 r0 bottom value=0
R76 "Comment" R_0402_1005Metric#1 218,107.09 r0 bottom value=1k
R77 "Comment" R_0402_1005Metric#1 179,91.09 r0 bottom value=470k
R78 "Comment" R_0402_1005Metric#1 207,81.09 r0 bottom value=10k
R79 "Comment" R_0402_1005Metric#1 189,53.09 r0 bottom value=0
R80 "Comment" R_0402_1005Metric#1 158,167.09 r0 bottom value=470k
R81 "Comment" R_0402_1005Metric#1 168,161.09 r0 bottom value=100k
R82 "Comment" R_0402_1005Metric#1 200,51.09 r0 bottom value=470k
R83 "Comment" R_0402_1005Metric#1 200,124.09 r0 bottom value=470k
R84 "Comment" R_0402_1005Metric#2 222.74,121.8 r0 top value=0
R85 "Comment" R_0402_1005Metric#1 163.957,146.558 r0 bottom value=47k
R86 "Comment" R_0402_1005Metric#1 80,132.09 r0 bottom value=4.7k
R87 "Comment" R_0402_1005Metric#1 179,155.09 r0 bottom value=100k
R88 "Comment" R_0402_1005Metric#1 179,123.09 r0 bottom value=0
R89 "Comment" R_0402_1005Metric#1 125,145.09 r0 bottom value=4.7k
R90 "Comment" R_0402_1005Metric#1 197,52.09 r0 bottom value=470k
R91 "Comment" R_0402_1005Metric#1 204,56.09 r0 bottom value=470k
R92 "Comment" R_0402_1005Metric#1 196,90.09 r0 bottom value=47
R93 "Comment" R_0402_1005Metric#1 85,44.09 r0 bottom value=47k
R94 "Comment" R_0402_1005Metric#2 82,128.09 r0 top value=470k
R95 "Comment" R_0402_1005Metric#1 153,65.09 r0 bottom value=47k
R96 "Comment" R_0402_1005Metric#1 99,86.09 r0 bottom value=47k
R97 "Comment" R_0402_1005Metric#1 198.882,23.241 r0 bottom value=10k
R98 "Comment" R_0402_1005Metric#1 81,93.09 r0 bottom value=4.7k
R99 "Comment" R_0402_1005Metric#1 86,40.09 r0 bottom value=470
R100 "Comment" R_0402_1005Metric#1 216,49.09 r0 bottom value=220
R101 "Comment" R_0402_1005Metric#2 87,139.09 r0 top value=33
R102 "Comment" R_0402_1005Metric#2 71,139.09 r0 top value=470k
R103 "Comment" R_0402_1005Metric#2 76,124.09 r0 top value=33
R104 "Comment" R_0402_1005Metric#1 182,122.09 r0 bottom value=47k
R105 "Comment" R_0402_1005Metric#2 94,159.09 r0 top value=470k
R106 "Comment" R_0402_1005Metric#2 83,133.09 r0 top value=33
R107 "Comment" R_0402_1005Metric#1 157,57.09 r0 bottom value=33k
R108 "Comment" R_0402_1005Metric#1 204,87.09 r0 bottom value=4.7k
R109 "Comment" R_0402_1005Metric#1 193,70.09 r0 bottom value=10k
R110 "Comment" R_0402_1005Metric#1 100,78.09 r0 bottom value=10k
R111 "Comment" R_0603_1608Metric#1 106,126.09 r0 bottom value=100
R112 "Comment" R_0402_1005Metric#1 165,47.09 r0 bottom value=47k
R113 "Comment" R_0402_1005Metric#1 157,68.09 r0 bottom value=470k
R114 "Comment" R_0402_1005Metric#1 182,68.09 r0 bottom value=47k
R115 "Comment" R_0402_1005Metric#1 152,55.09 r0 bottom value=10k
R116 "Comment" R_0402_1005Metric#2 77,98.09 r0 top value=100k
R117 "Comment" R_0402_1005Metric#1 134,46.09 r0 bottom value=47k
R118 "Comment" R_0402_1005Metric#1 195,93.09 r0 bottom value=100k
R119 "Comment" R_0402_1005Metric#1 91,91.09 r0 bottom value=470k
R120 "Comment" R_0402_1005Metric#1 146,59.09 r0 bottom value=100k
R121 "Comment" R_0402_1005Metric#1 62,82.09 r0 bottom value=100k
R122 "Comment" R_0402_1005Metric#2 78,74.09 r0 top value=470k
R123 "Comment" R_0402_1005Metric#2 78,77.09 r0 top value=470k
R124 "Comment" R_0402_1005Metric#2 78,80.09 r0 top value=470k
R125 "Comment" R_0402_1005Metric#2 71,46.09 r0 top value=470k
R126 "Comment" R_0402_1005Metric#1 131,42.09 r0 bottom value=470k
R127 "Comment" R_0402_1005Metric#2 200,28.09 r0 top value=470k
R128 "Comment" R_0402_1005Metric#1 107,71.09 r0 bottom value=470k
R129 "Comment" R_0402_1005Metric#1 192,65.09 r0 bottom value=133k
R130 "Comment" R_0402_1005Metric#2 184,49.09 r0 top value=470k
R131 "Comment" R_0402_1005Metric#1 224,125.09 r0 bottom value=DNP
R132 "Comment" R_0402_1005Metric#1 96,82.09 r0 bottom value=2k
R133 "Comment" R_0402_1005Metric#1 92,80.09 r0 bottom value=2k
R134 "Comment" R_0402_1005Metric#1 219.07,117.23 r90 bottom value=10k
R135 "Comment" R_0402_1005Metric#2 69,56.09 r0 top value=470k
R136 "Comment" R_0402_1005Metric#1 96,79.09 r0 bottom value=1k
R137 "Comment" R_0402_1005Metric#1 96,85.09 r0 bottom value=2k
R138 "Comment" R_0402_1005Metric#1 91,75.09 r0 bottom value=1k
R139 "Comment" R_0402_1005Metric#2 183,43.09 r0 top value=470k
R140 "Comment" R_0402_1005Metric#1 99,73.09 r0 bottom value=1k
R141 "Comment" R_0402_1005Metric#1 99,82.09 r0 bottom value=1k
R142 "Comment" R_0402_1005Metric#1 93,83.09 r0 bottom value=1k
R143 "Comment" R_0402_1005Metric#1 96,74.09 r0 bottom value=10k
R144 "Comment" R_0402_1005Metric#2 201,124.09 r0 top value=470k
R145 "Comment" R_0402_1005Metric#1 190,135.09 r0 bottom value=DNP
R146 "Comment" R_0402_1005Metric#1 172,158.09 r0 bottom value=470k
R147 "Comment" R_0402_1005Metric#1 156,147.09 r0 bottom value=470k
R148 "Comment" R_0402_1005Metric#2 82,153.09 r0 top value=470k
R149 "Comment" R_0402_1005Metric#1 115,87.09 r0 bottom value=33
R150 "Comment" R_0402_1005Metric#2 92,124.09 r0 top value=100k
R151 "Comment" R_0402_1005Metric#2 71,150.09 r0 top value=100k
R152 "Comment" R_0402_1005Metric#1 205,32.09 r0 bottom value=470k
R153 "Comment" R_0402_1005Metric#2 90,127.09 r0 top value=100k
R154 "Comment" R_0402_1005Metric#2 96,127.09 r0 top value=33
R155 "Comment" R_0402_1005Metric#2 87,130.09 r0 top value=100k
R156 "Comment" R_0402_1005Metric#1 202,28.09 r0 bottom value=470k
R157 "Comment" R_0402_1005Metric#2 71,147.09 r0 top value=100k
R158 "Comment" R_0402_1005Metric#2 180,41.09 r0 top value=470k
R159 "Comment" R_0402_1005Metric#2 96,124.09 r0 top value=33
R160 "Comment" R_0402_1005Metric#1 136,60.09 r0 bottom value=470k
R161 "Comment" R_0402_1005Metric#1 186,39.09 r0 bottom value=470k
R162 "Comment" R_0402_1005Metric#1 137,46.09 r0 bottom value=470k
R163 "Comment" R_0402_1005Metric#1 138,23.09 r0 bottom value=10k
R164 "Comment" R_0402_1005Metric#1 135,25.09 r0 bottom value=10k
R165 "Comment" R_0402_1005Metric#1 159,42.09 r0 bottom value=47k
R166 "Comment" R_0402_1005Metric#1 145.984,6.627 r0 bottom value=10k
R167 "Comment" R_0402_1005Metric#1 138,144.09 r0 bottom value=100k
R168 "Comment" R_0402_1005Metric#1 141,26.09 r0 bottom value=10k
R169 "Comment" R_0402_1005Metric#1 164,34.09 r0 bottom value=10k
R170 "Comment" R_0402_1005Metric#1 164,37.09 r0 bottom value=10k
R171 "Comment" R_0402_1005Metric#1 142,163.09 r0 bottom value=47k
R172 "Comment" R_0402_1005Metric#1 158,34.09 r0 bottom value=10k
R173 "Comment" R_0402_1005Metric#1 186,44.09 r0 bottom value=470k
R174 "Comment" R_0402_1005Metric#1 129.286,6.223 r0 bottom value=10k
R175 "Comment" R_0402_1005Metric#1 158,37.09 r0 bottom value=10k
R176 "Comment" R_0402_1005Metric#1 138,26.09 r0 bottom value=10k
R177 "Comment" R_0402_1005Metric#1 134,28.09 r0 bottom value=47k
R178 "Comment" R_0402_1005Metric#1 161,37.09 r0 bottom value=10k
R179 "Comment" R_0402_1005Metric#1 131,27.09 r0 bottom value=10k
R180 "Comment" R_0402_1005Metric#1 206,65.09 r0 bottom value=180k
R181 "Comment" R_0402_1005Metric#2 121.539,94.742 r0 top value=10k
R182 "Comment" R_0402_1005Metric#1 189,42.09 r0 bottom value=470k
R183 "Comment" R_0402_1005Metric#2 66,59.09 r0 top value=470k
R184 "Comment" R_0402_1005Metric#1 186,138.09 r0 bottom value=DNP
R185 "Comment" R_0402_1005Metric#1 146,78.09 r0 bottom value=4.7k
R186 "Comment" R_0402_1005Metric#1 200,48.09 r0 bottom value=470k
R187 "Comment" R_0402_1005Metric#2 103,72.09 r0 top value=470k
R188 "Comment" R_0402_1005Metric#2 100,85.09 r0 top value=10k
R189 "Comment" R_0402_1005Metric#2 103,76.09 r0 top value=470k
R190 "Comment" R_0402_1005Metric#2 115,70.09 r0 top value=470k
R191 "Comment" R_0402_1005Metric#2 100,76.09 r0 top value=470k
R192 "Comment" R_0402_1005Metric#2 94,87.09 r0 top value=10k
R193 "Comment" R_0402_1005Metric#2 100,82.09 r0 top value=10k
R194 "Comment" R_0402_1005Metric#2 103,79.09 r0 top value=470k
R195 "Comment" R_0402_1005Metric#1 159,141.09 r0 bottom value=0
R196 "Comment" R_0402_1005Metric#1 203,65.09 r0 bottom value=47k
R197 "Comment" R_0402_1005Metric#1 218,46.09 r0 bottom value=47k
R198 "Comment" R_0402_1005Metric#1 213,50.09 r0 bottom value=10k
R199 "Comment" R_0402_1005Metric#1 211,47.09 r0 bottom value=DNP
R200 "Comment" R_0402_1005Metric#1 218,52.09 r0 bottom value=47k
R201 "Comment" R_0402_1005Metric#1 207,68.09 r0 bottom value=100k
R202 "Comment" R_0402_1005Metric#1 220.19,48.63 r90 bottom value=DNP
R203 "Comment" R_0402_1005Metric#1 215,53.09 r0 bottom value=10k
R204 "Comment" R_0402_1005Metric#1 212,53.09 r0 bottom value=47k
R205 "Comment" R_0402_1005Metric#1 204,68.09 r0 bottom value=100k
R206 "Comment" R_0402_1005Metric#1 207,71.09 r0 bottom value=47k
R207 "Comment" R_0402_1005Metric#1 198,143.09 r0 bottom value=120k
R208 "Comment" R_0402_1005Metric#1 161,61.09 r0 bottom value=120k
R209 "Comment" R_0402_1005Metric#1 160,67.09 r0 bottom value=100k
R210 "Comment" R_0402_1005Metric#1 150,155.09 r0 bottom value=100K
R211 "Comment" R_0402_1005Metric#1 147,155.09 r0 bottom value=120k
R212 "Comment" R_0402_1005Metric#1 134,163.09 r0 bottom value=100k
R213 "Comment" R_0402_1005Metric#1 139,152.09 r0 bottom value=120k
R214 "Comment" R_0402_1005Metric#1 148,160.09 r0 bottom value=100k
R215 "Comment" R_0402_1005Metric#1 205,35.09 r0 bottom value=470k
R216 "Comment" R_0402_1005Metric#1 140,63.09 r0 bottom value=470k